# Altium PCB MolsonPCB.PcbDoc (part 1 of 9)
Units mil, origin at the board's own origin, x right, y up, seen from the top; angles counter-clockwise.
Board outline 8000 x 6000 mil, 14 copper layers (TopLayer (1 oz), InternalPlane1 (0.5 oz), InternalPlane2 (0.5 oz), MidLayer1 (0.5 oz), InternalPlane3 (0.5 oz), MidLayer2 (0.5 oz), InternalPlane4 (0.5 oz), InternalPlane5 (0.5 oz), MidLayer3 (0.5 oz), InternalPlane6 (0.5 oz), MidLayer4 (0.5 oz), InternalPlane7 (0.5 oz), InternalPlane8 (0.5 oz), BottomLayer (1 oz)), stack 86.2 mil thick; 657 components, 643 nets, 3094 pads, 1958 vias.
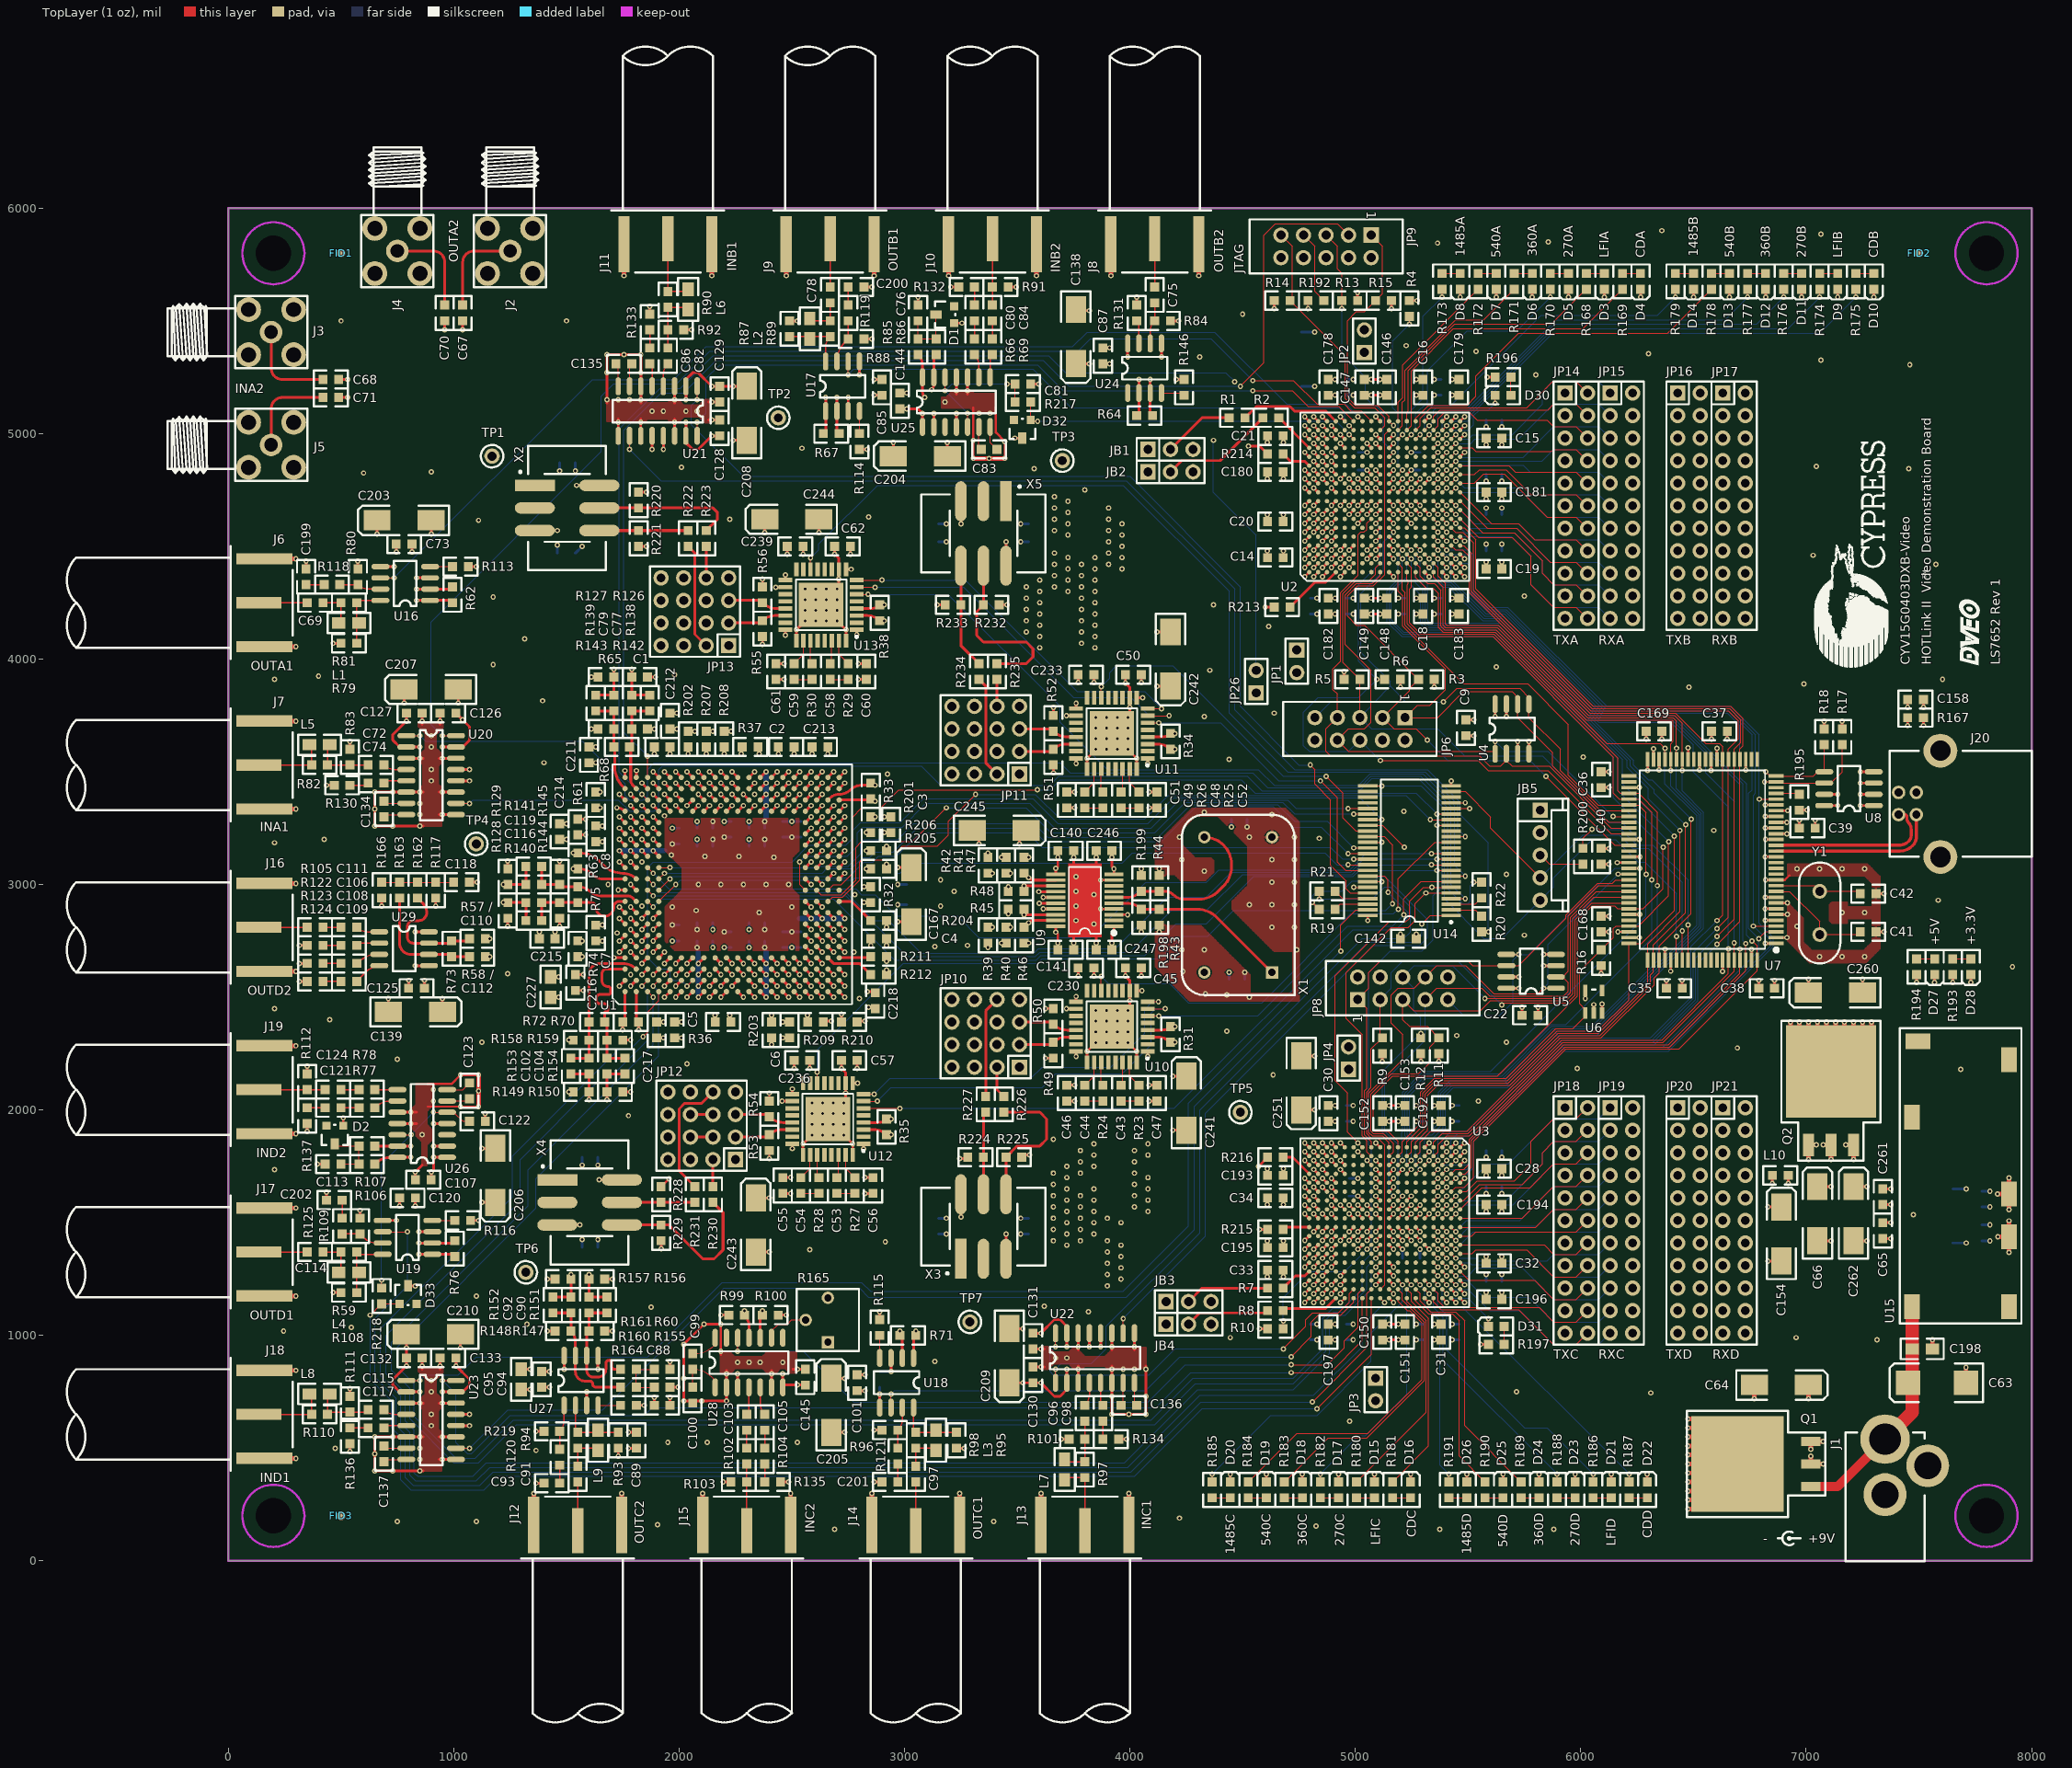
[diagram p0: TopLayer (1 oz) view]
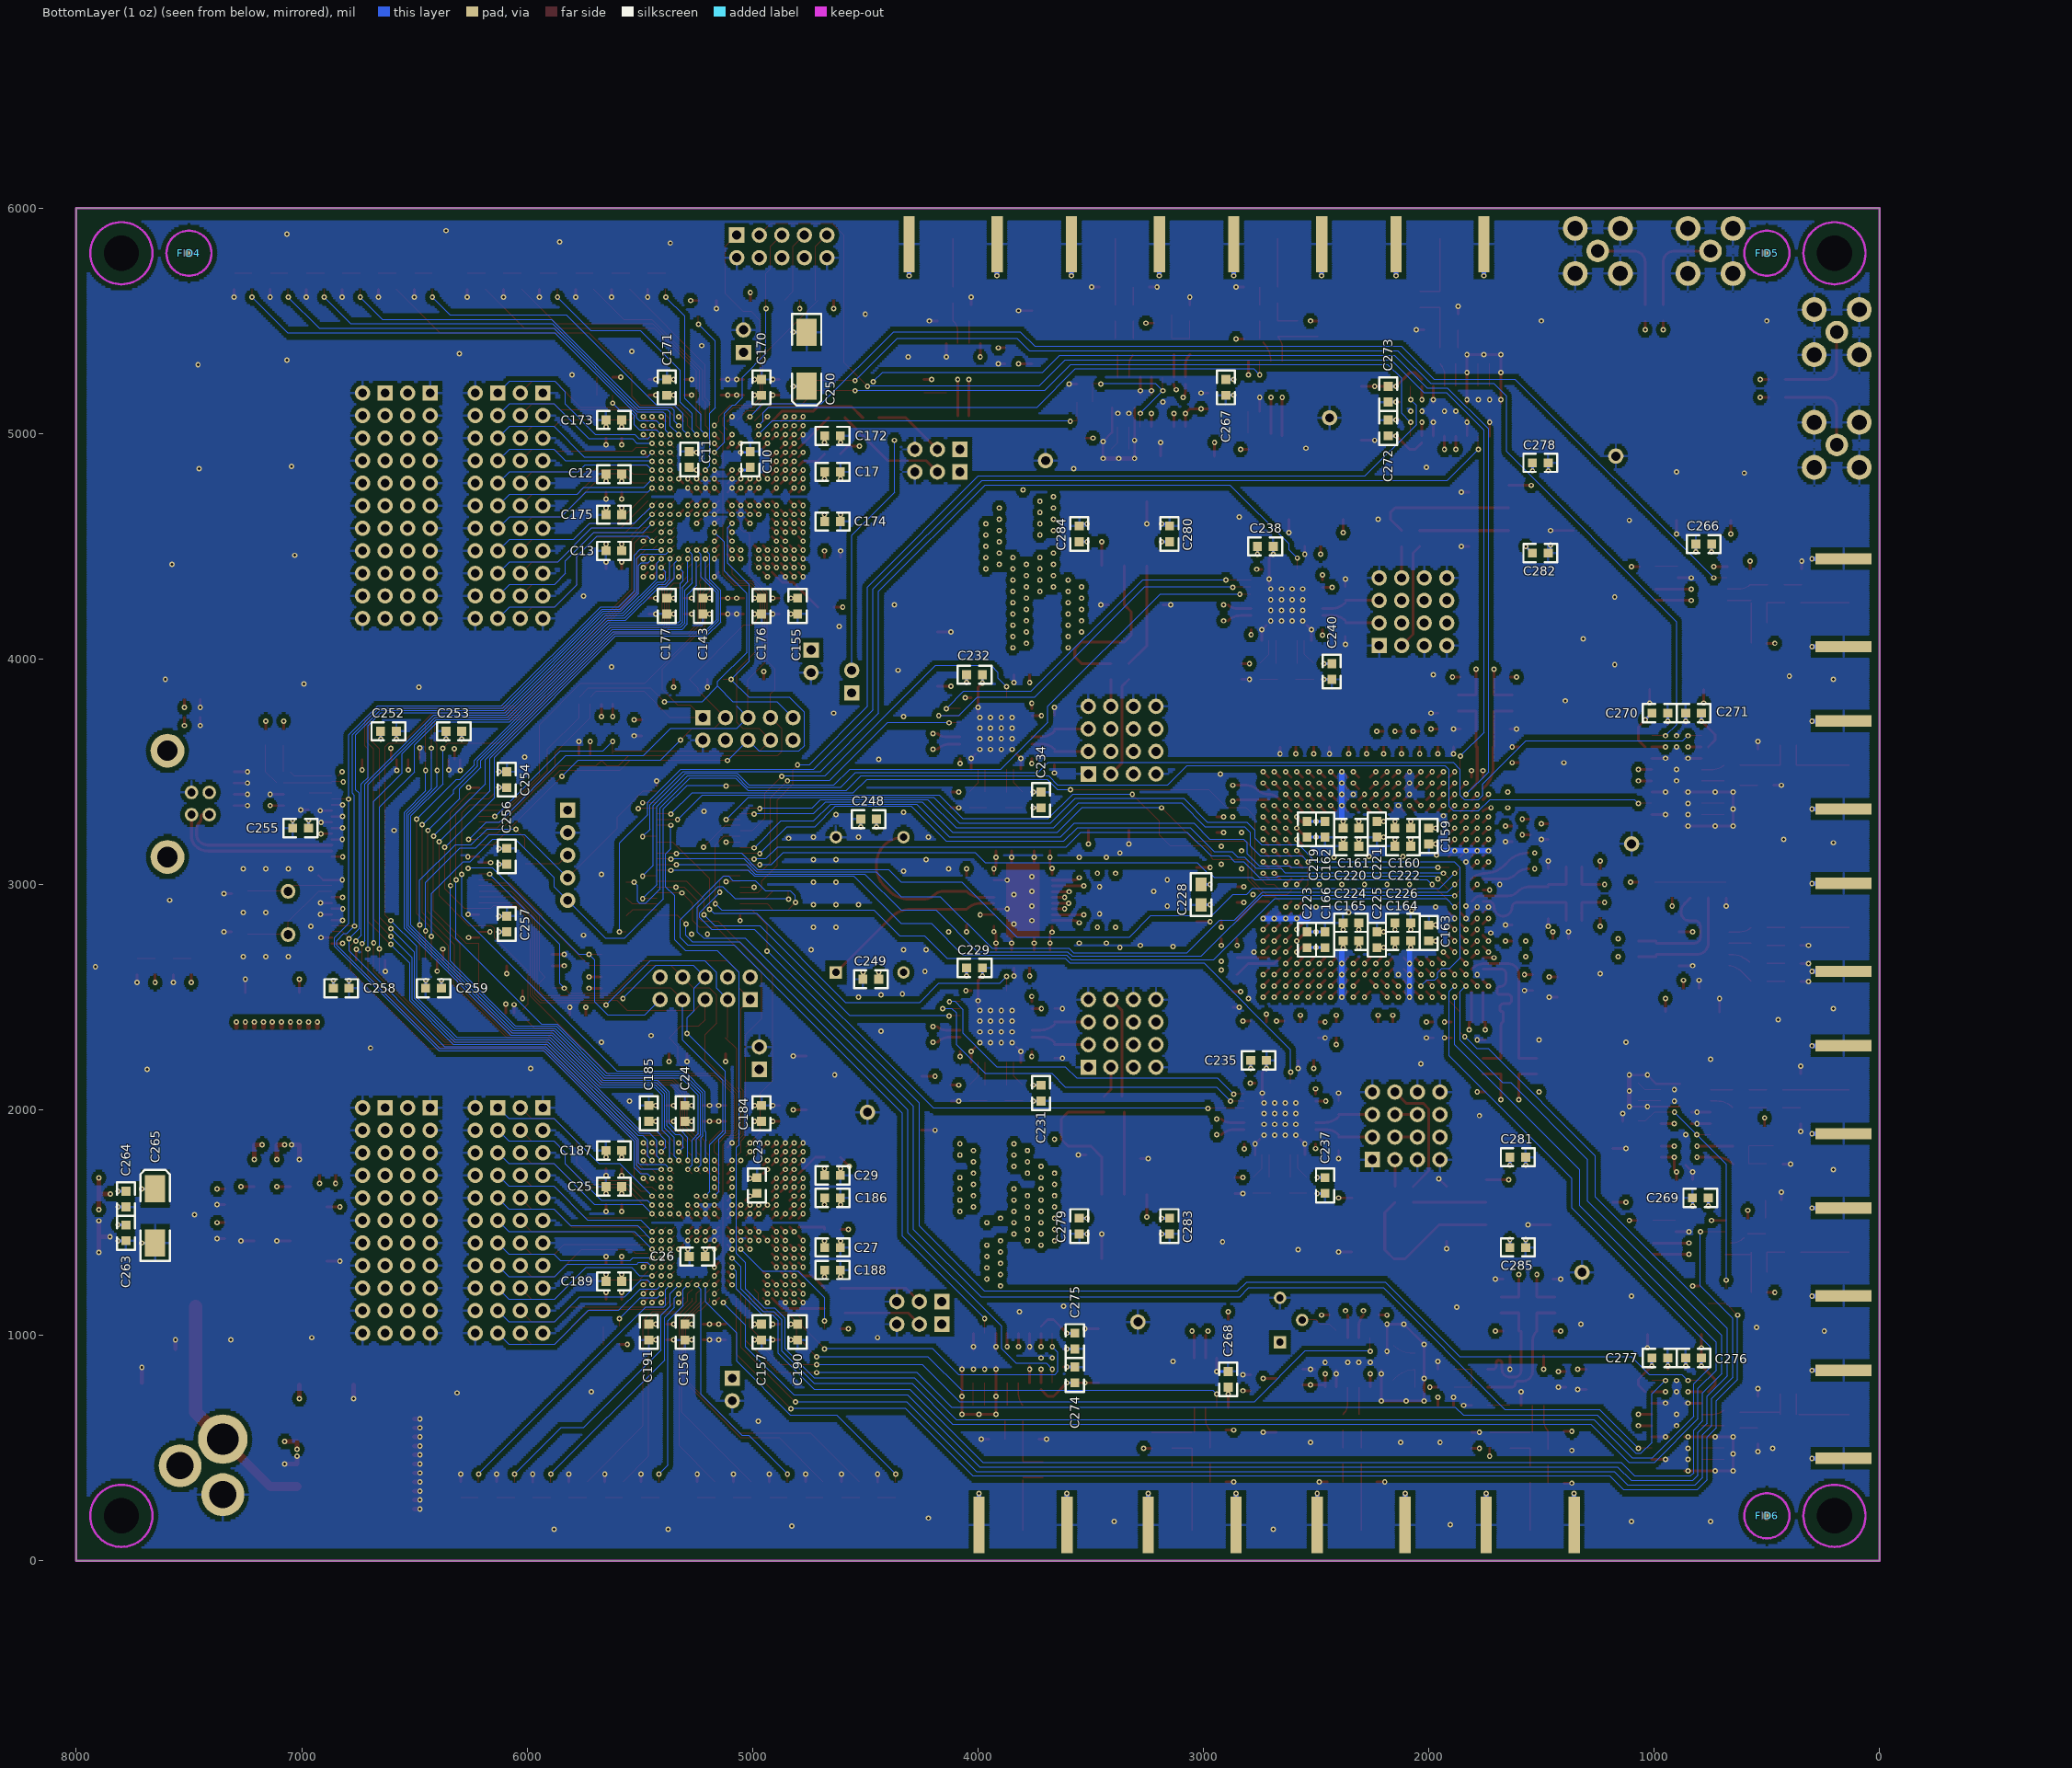
[diagram p1: BottomLayer (1 oz) view, seen from below]
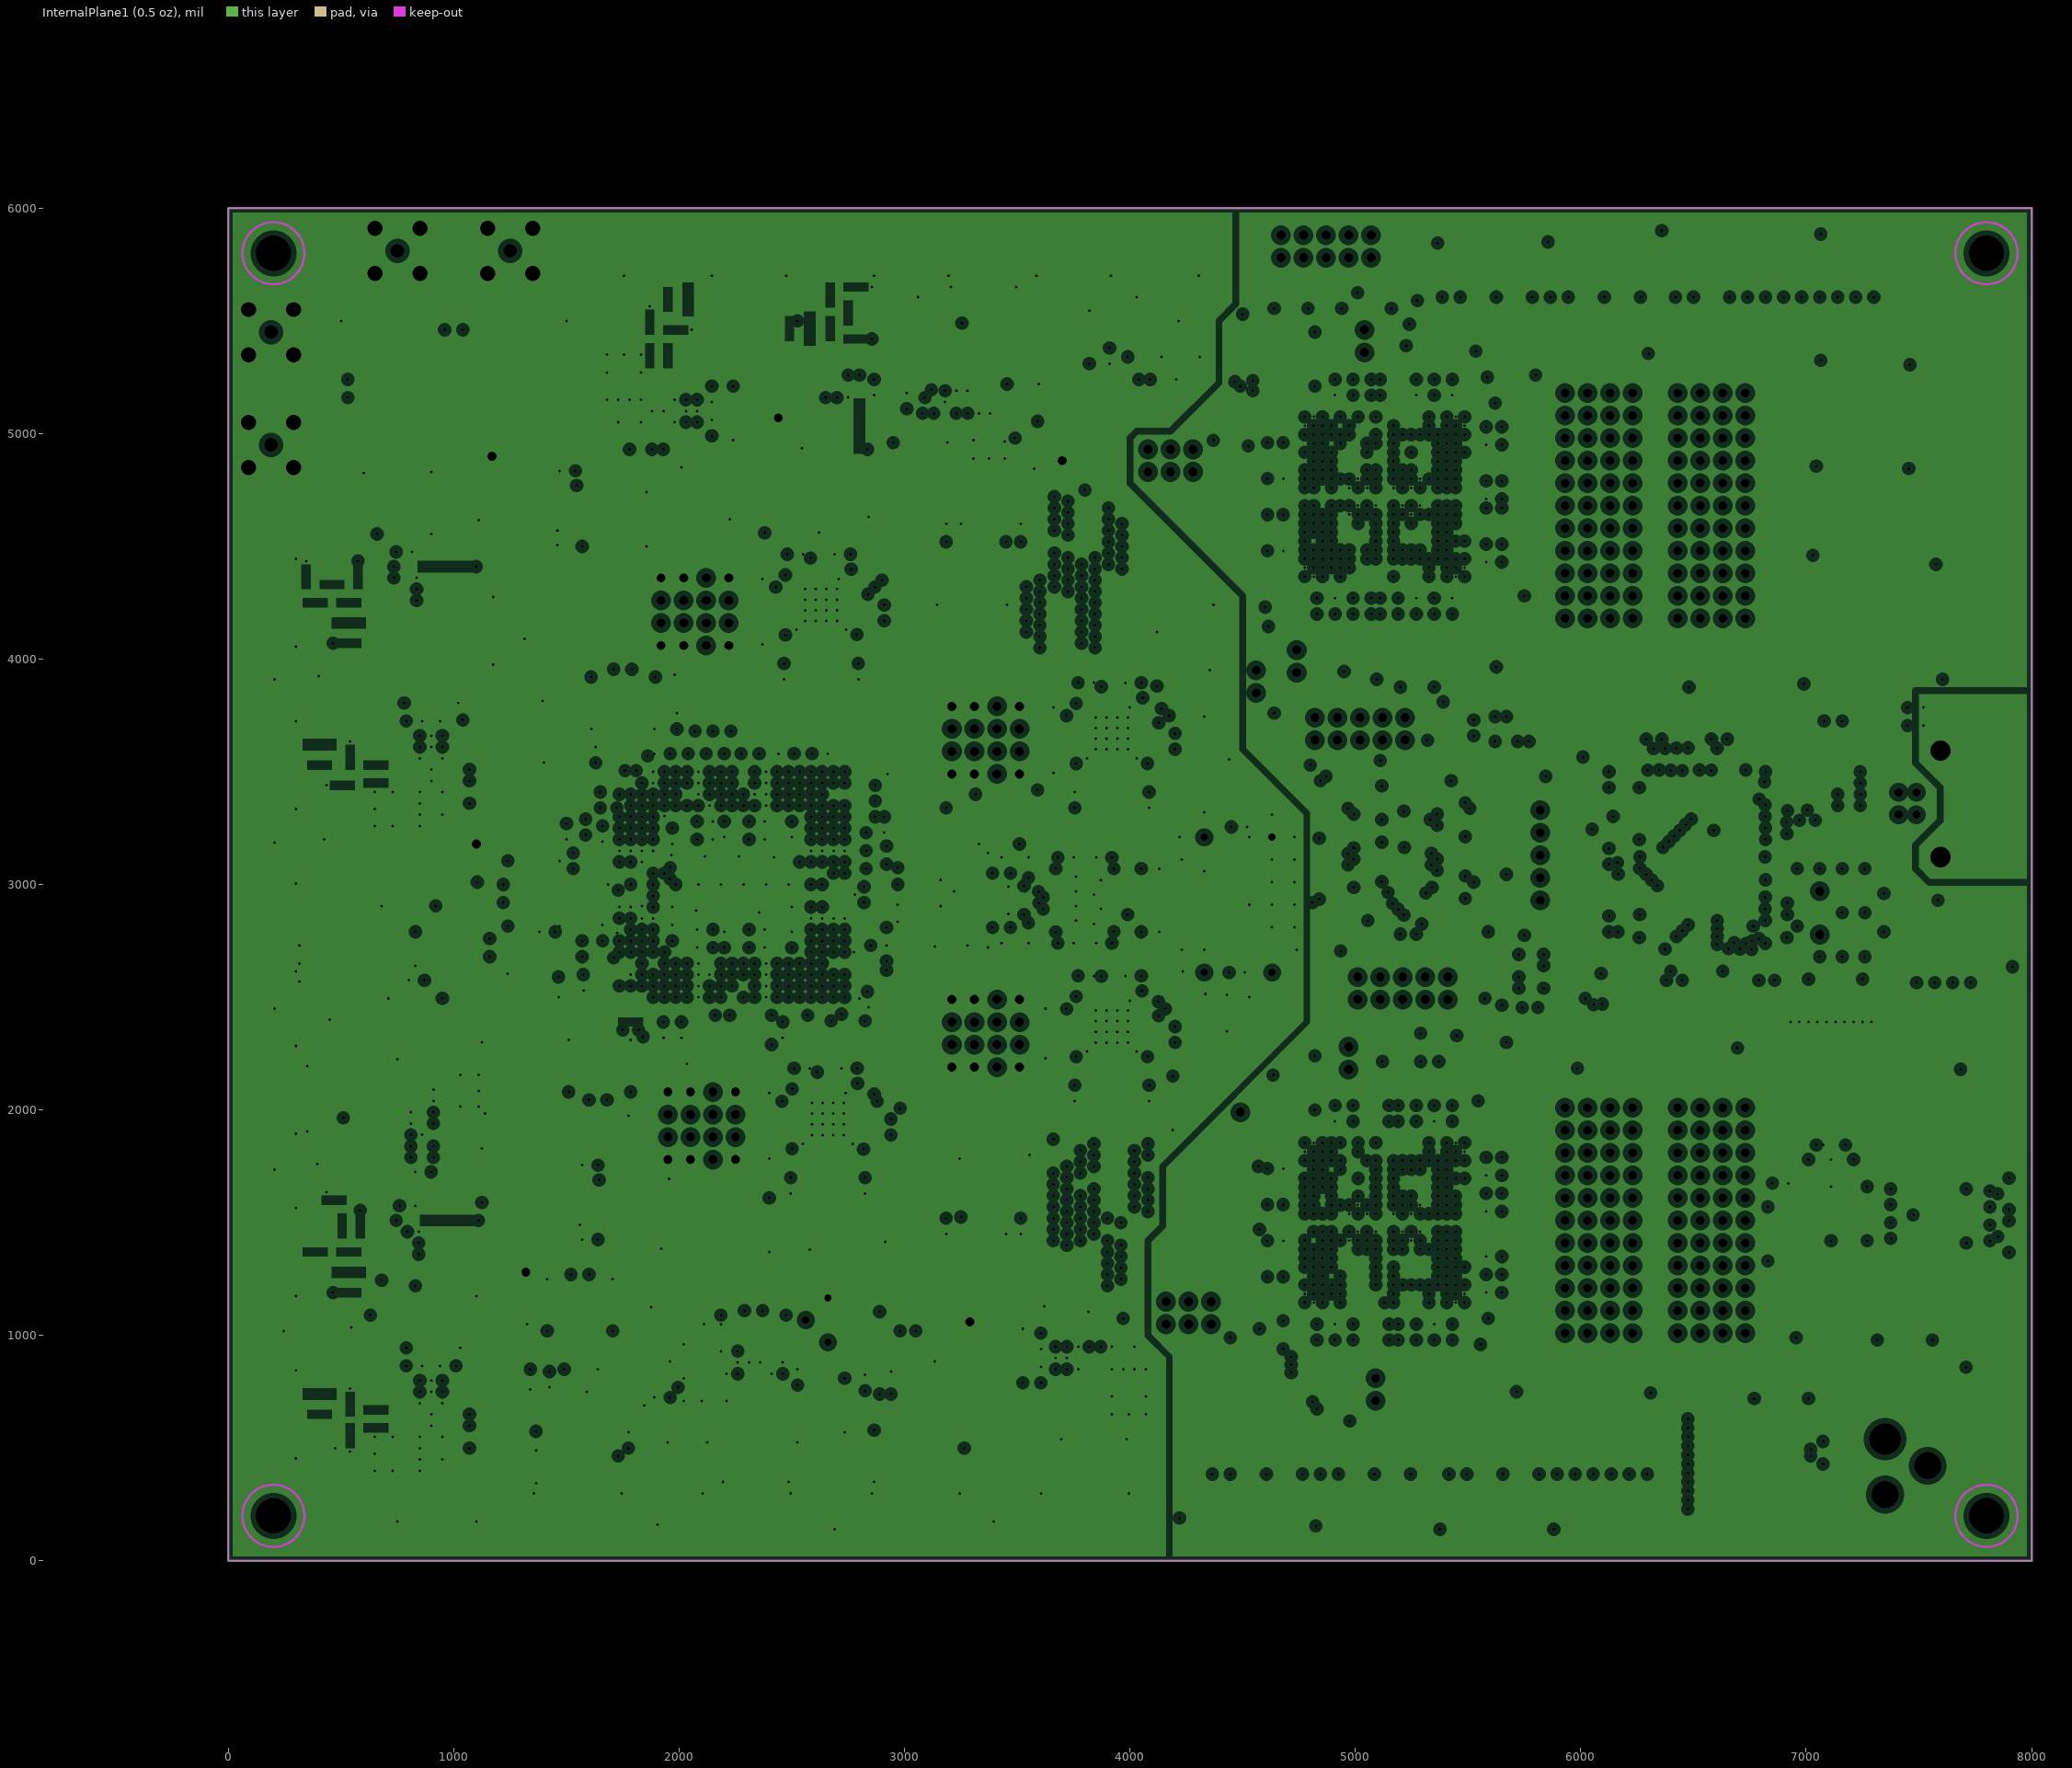
[diagram p2: InternalPlane1 (0.5 oz), clearances drawn from the general rule]
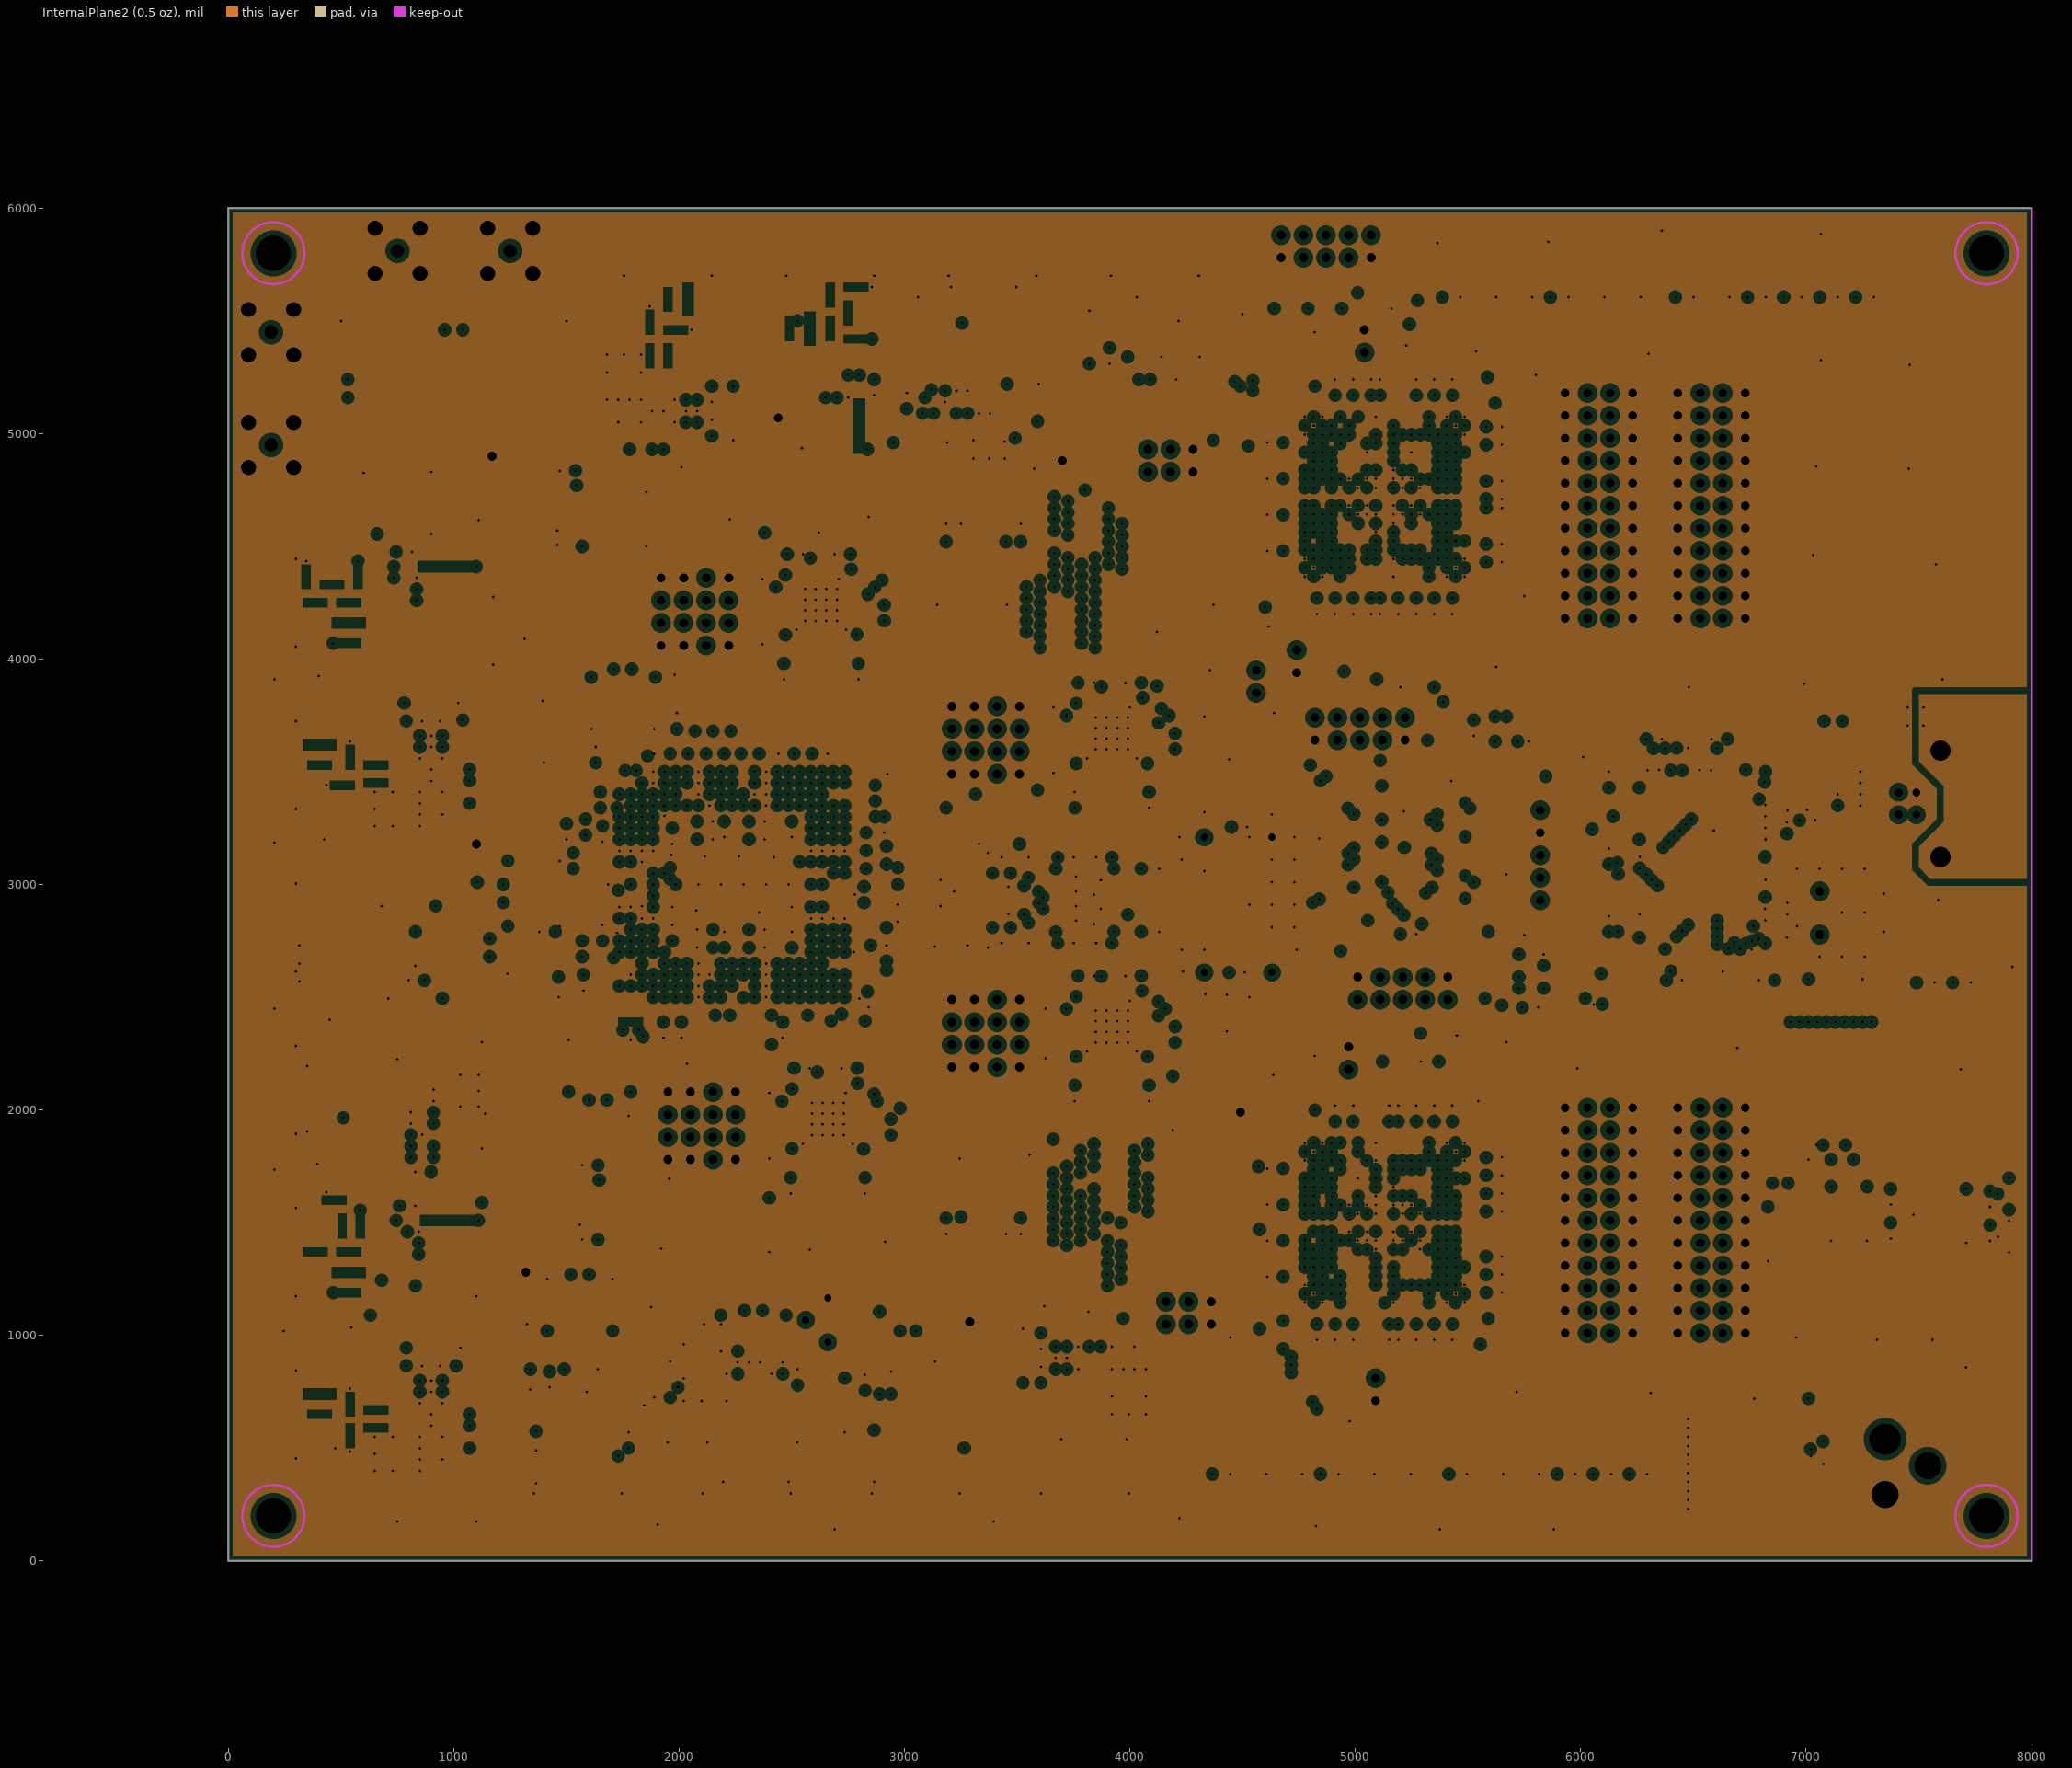
[diagram p3: InternalPlane2 (0.5 oz), clearances drawn from the general rule]
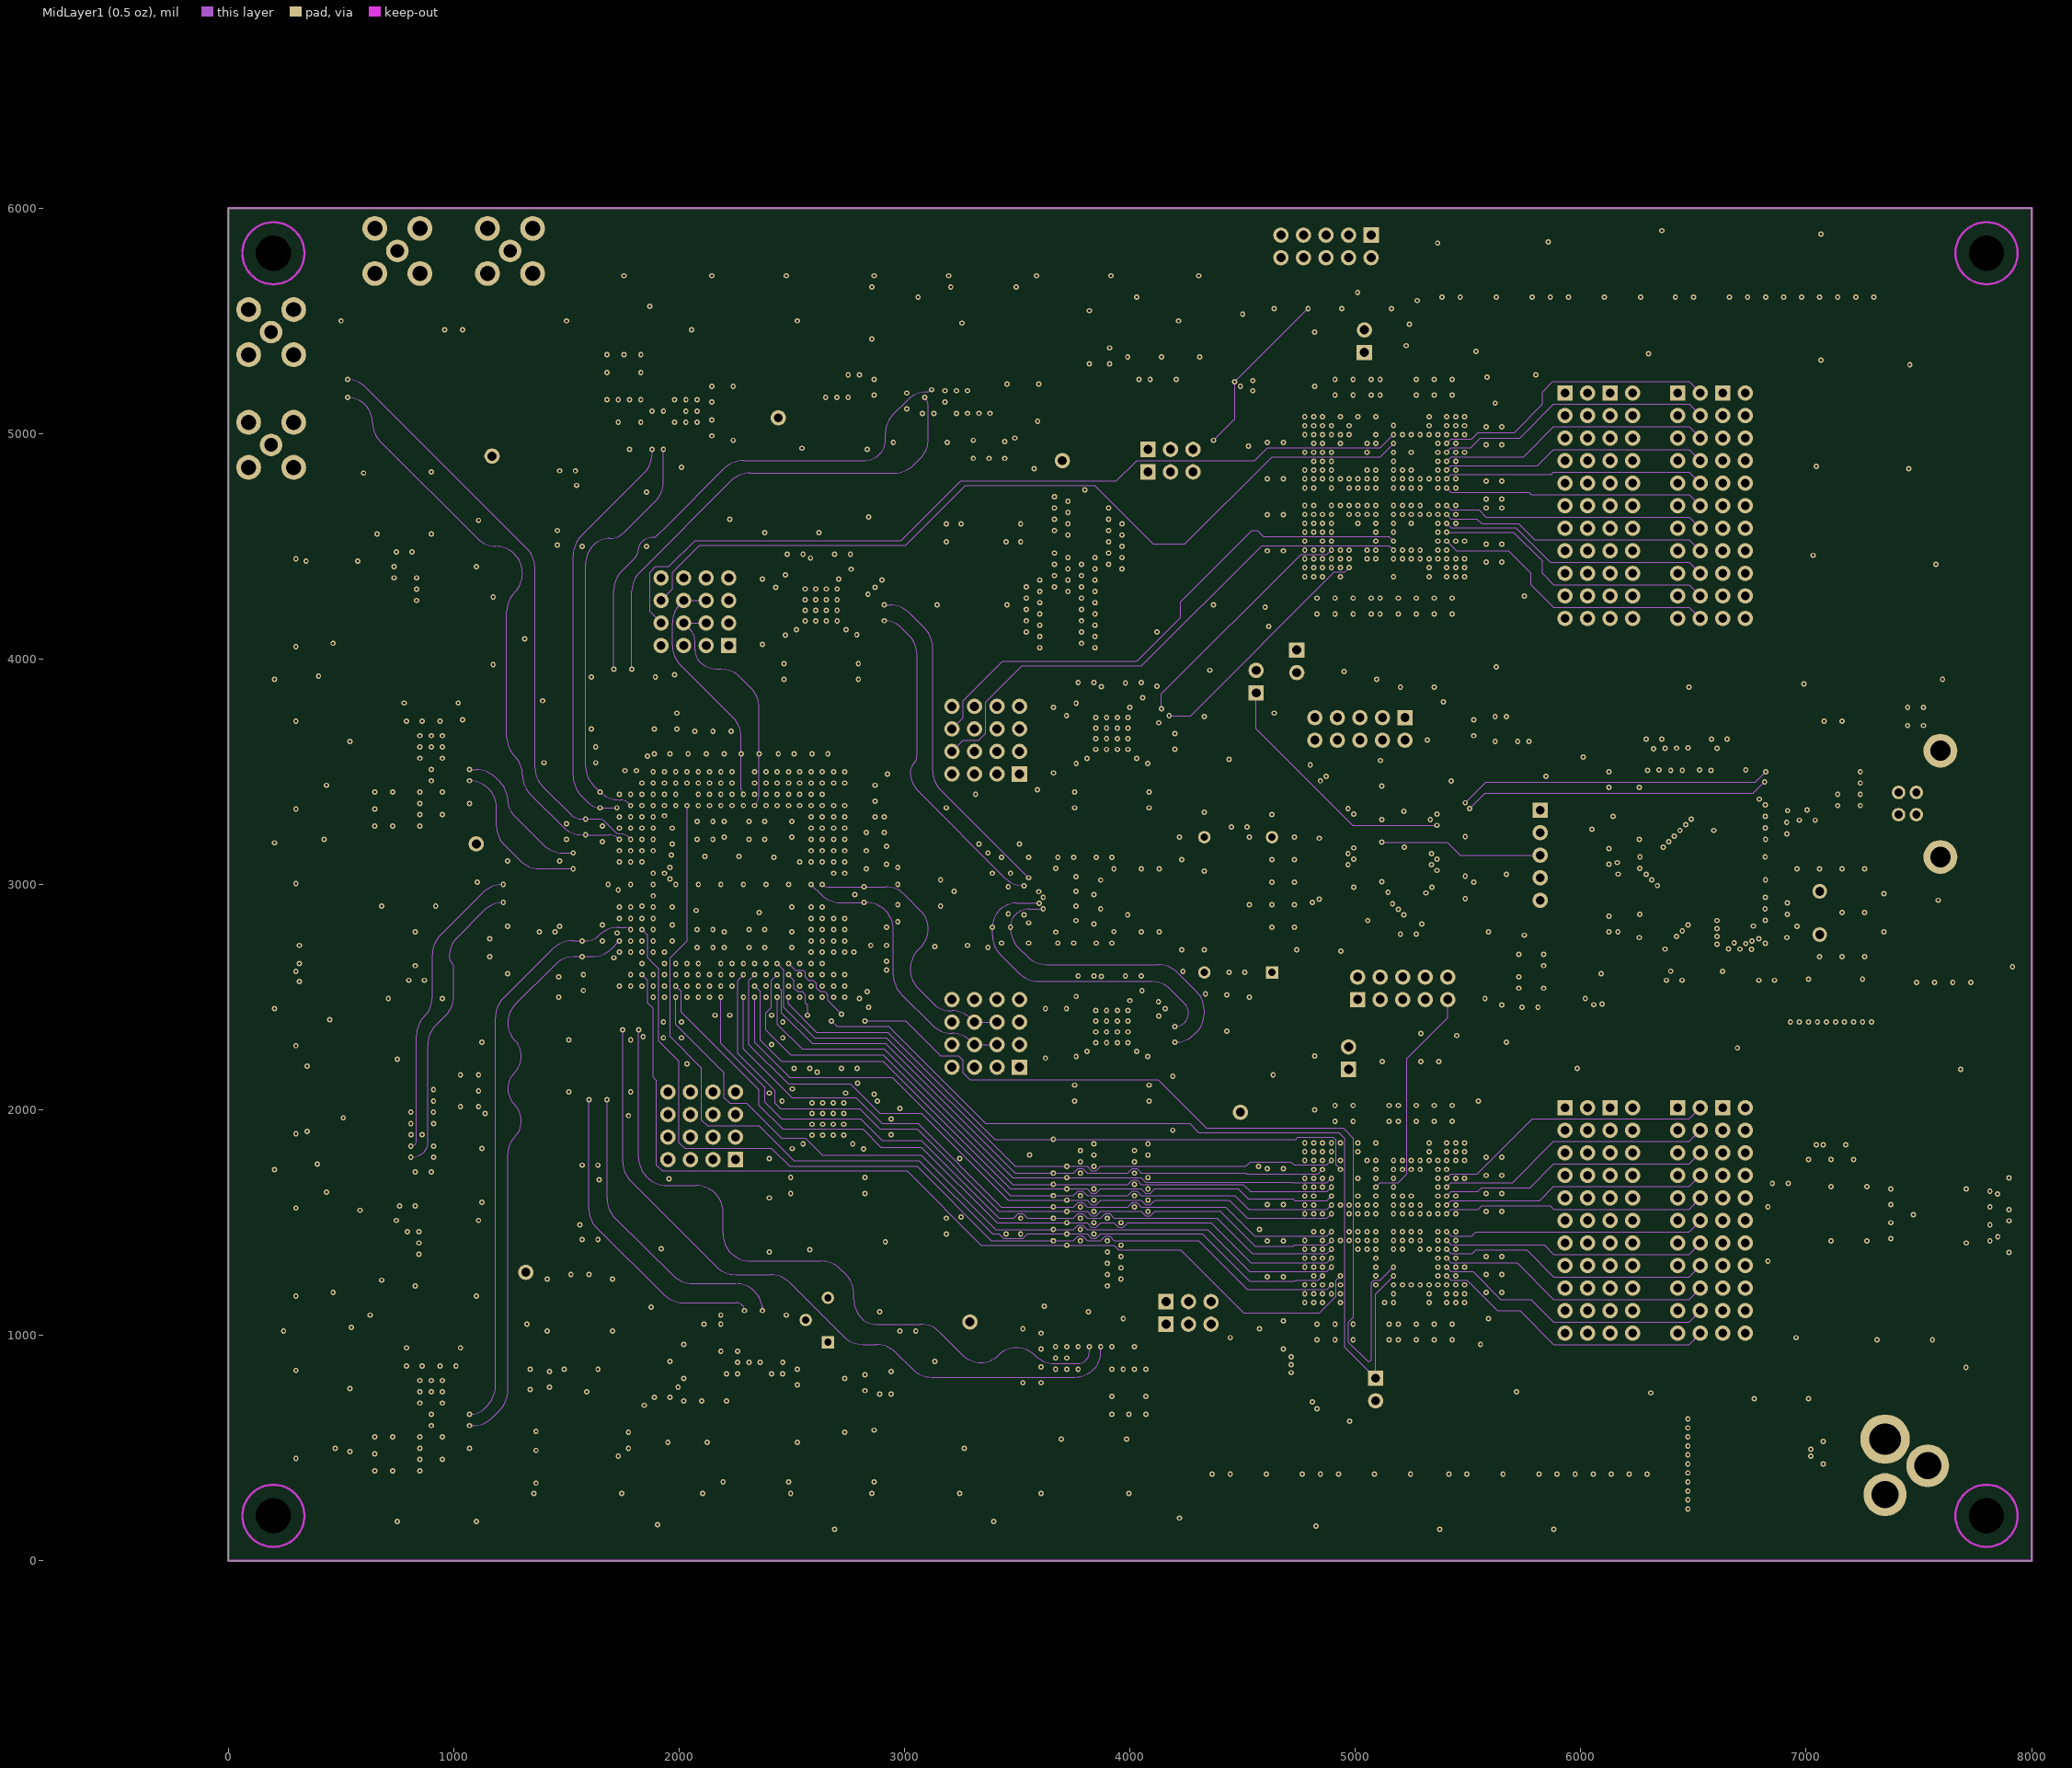
[diagram p4: MidLayer1 (0.5 oz)]
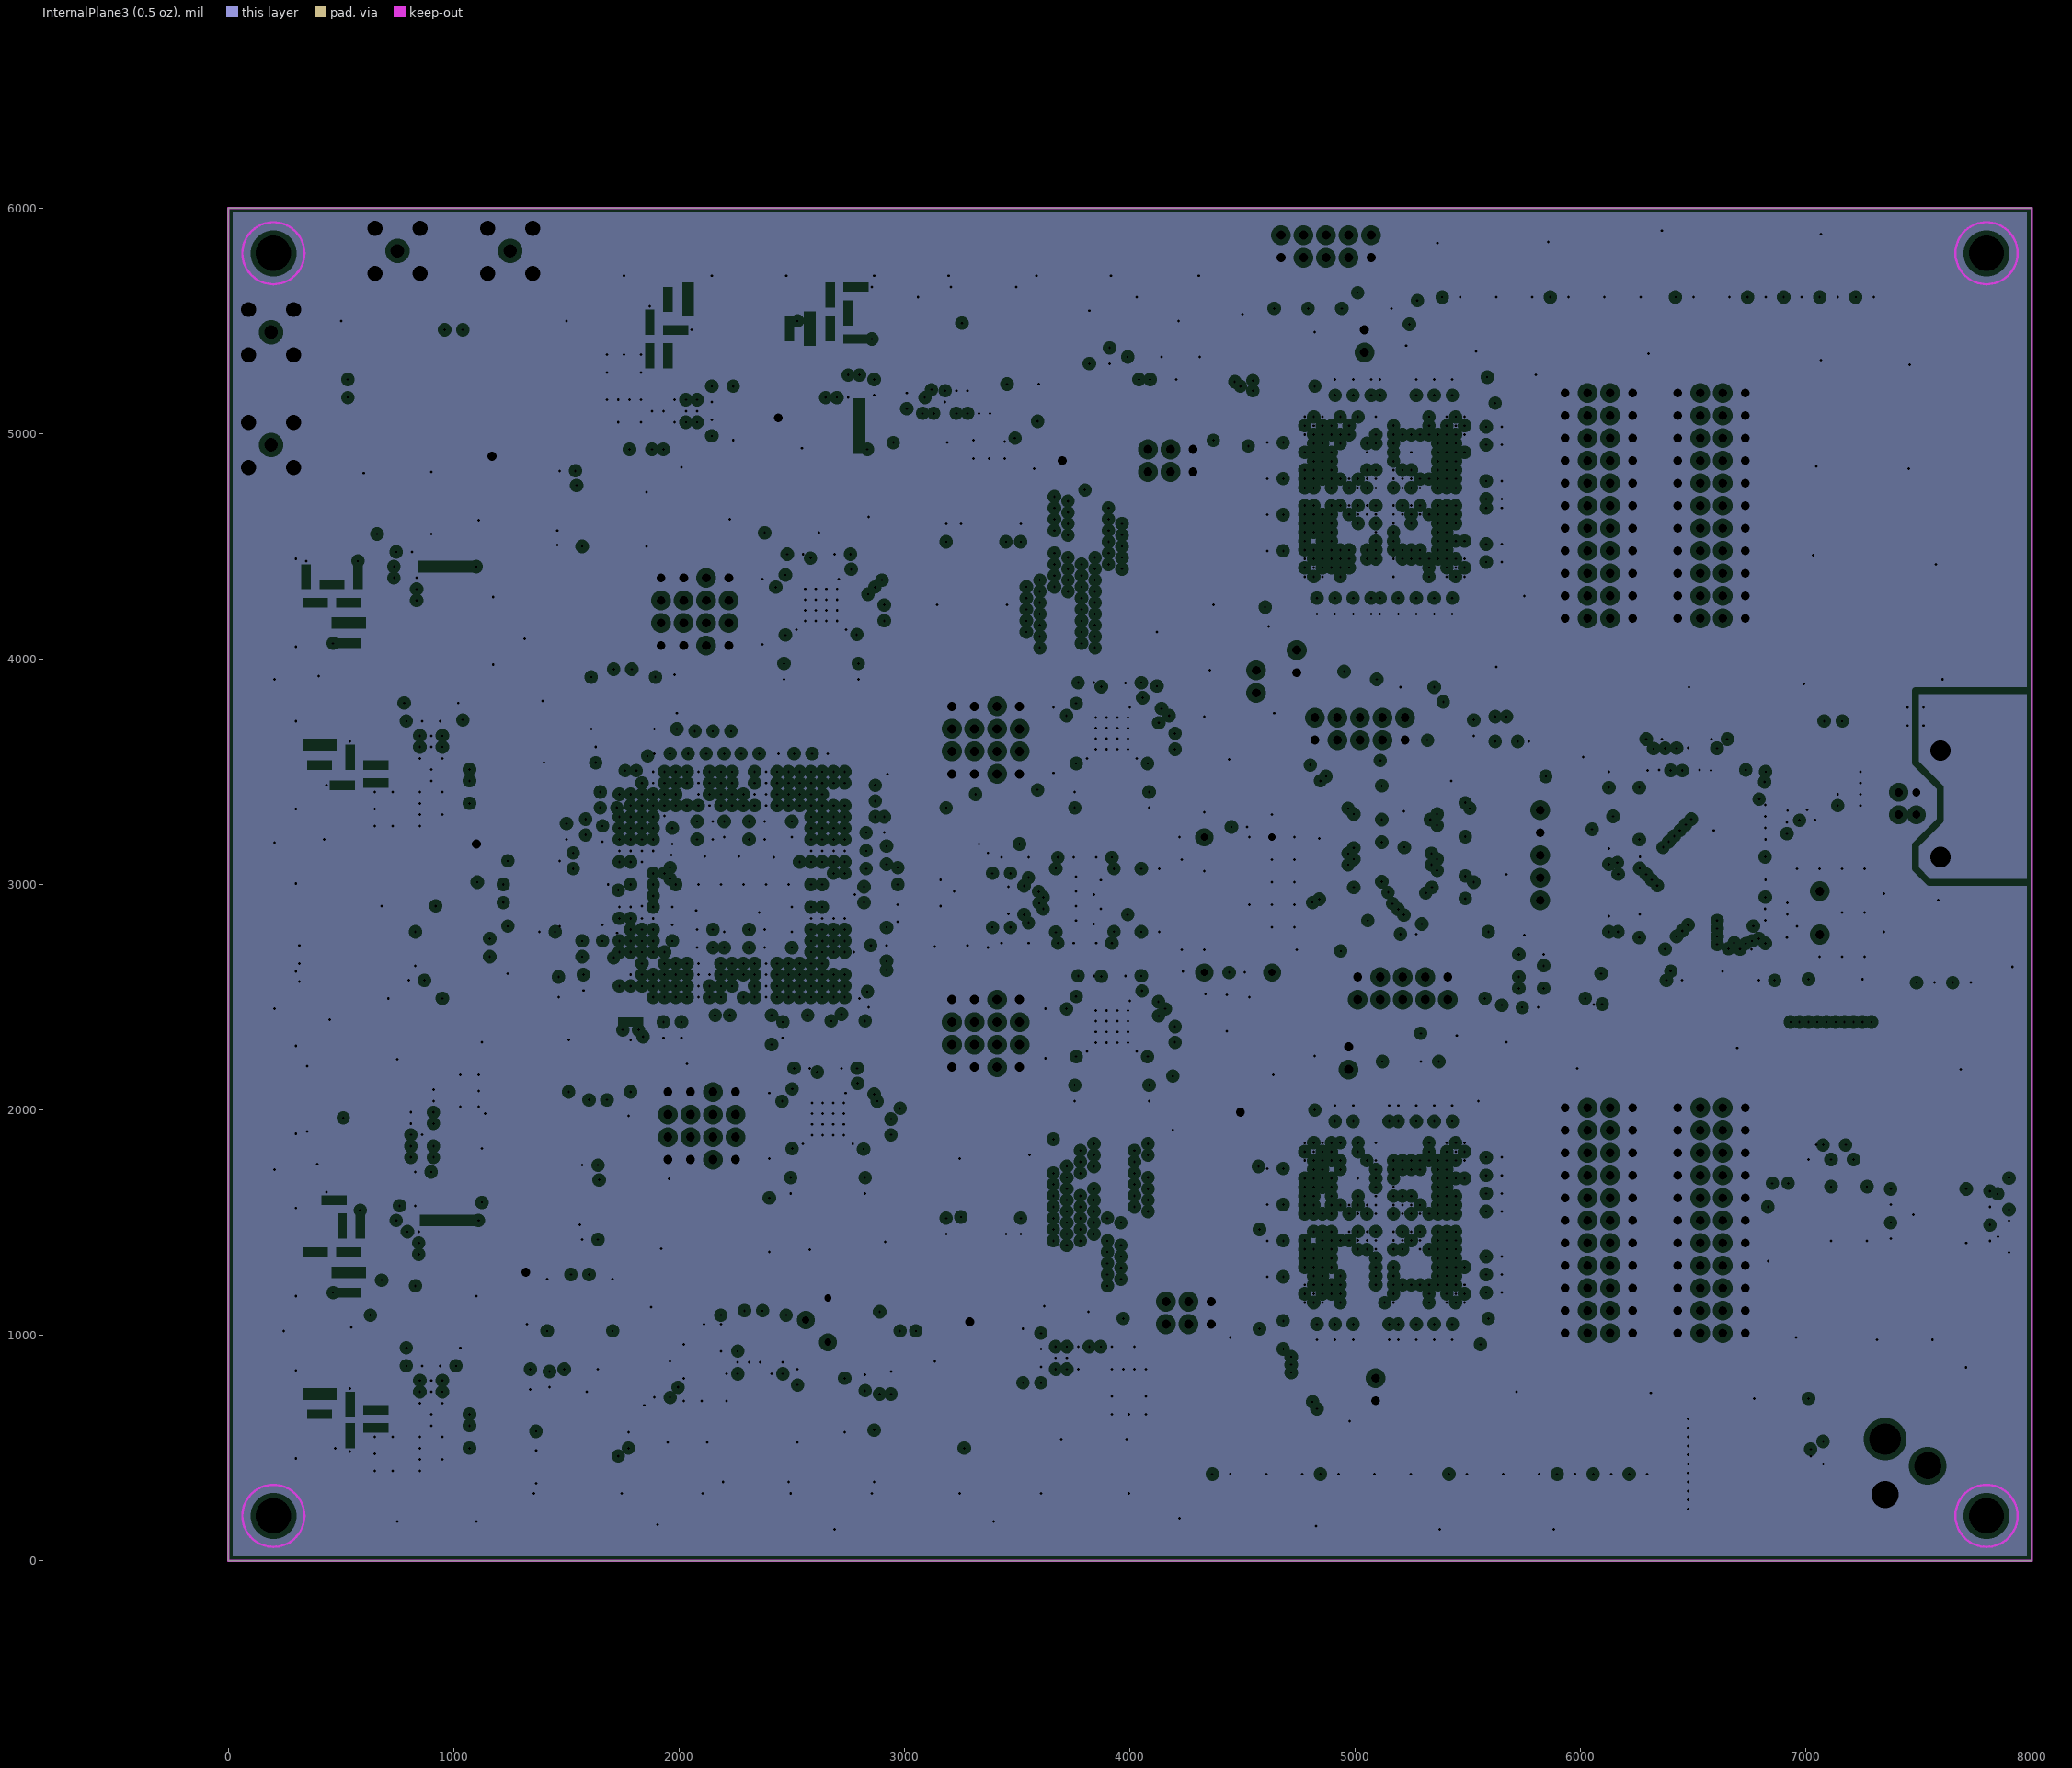
[diagram p5: InternalPlane3 (0.5 oz), clearances drawn from the general rule]
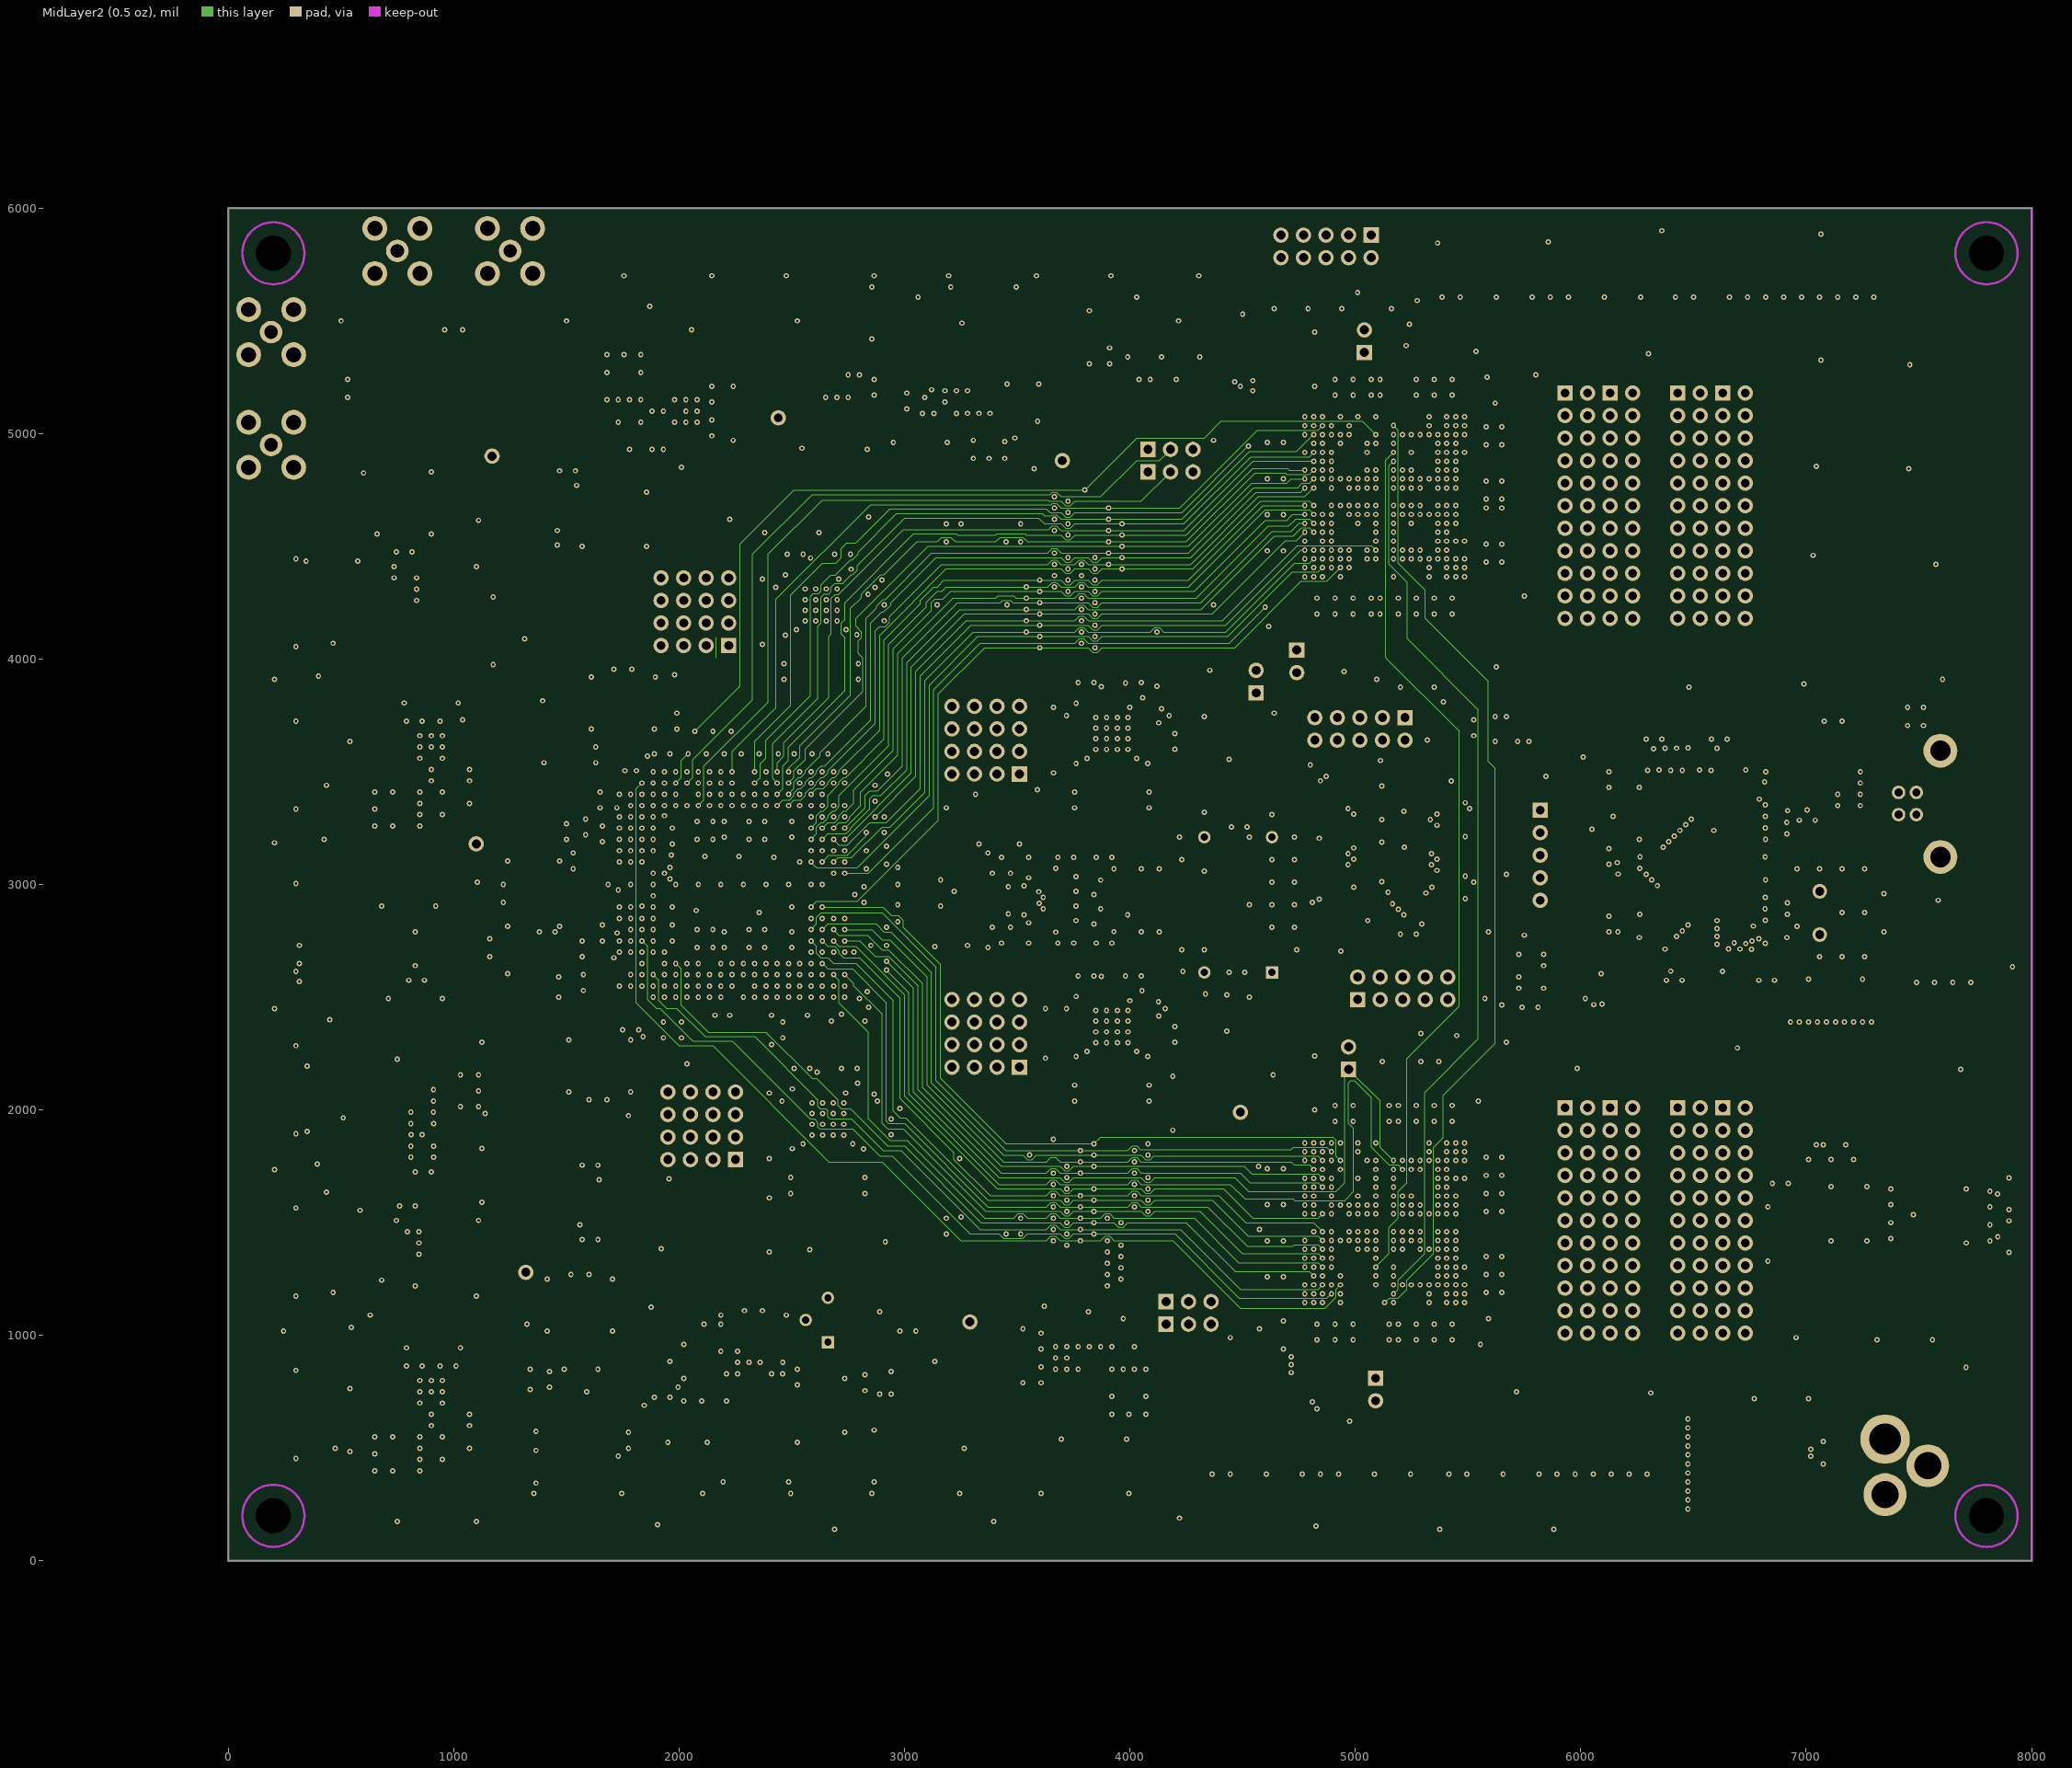
[diagram p6: MidLayer2 (0.5 oz)]
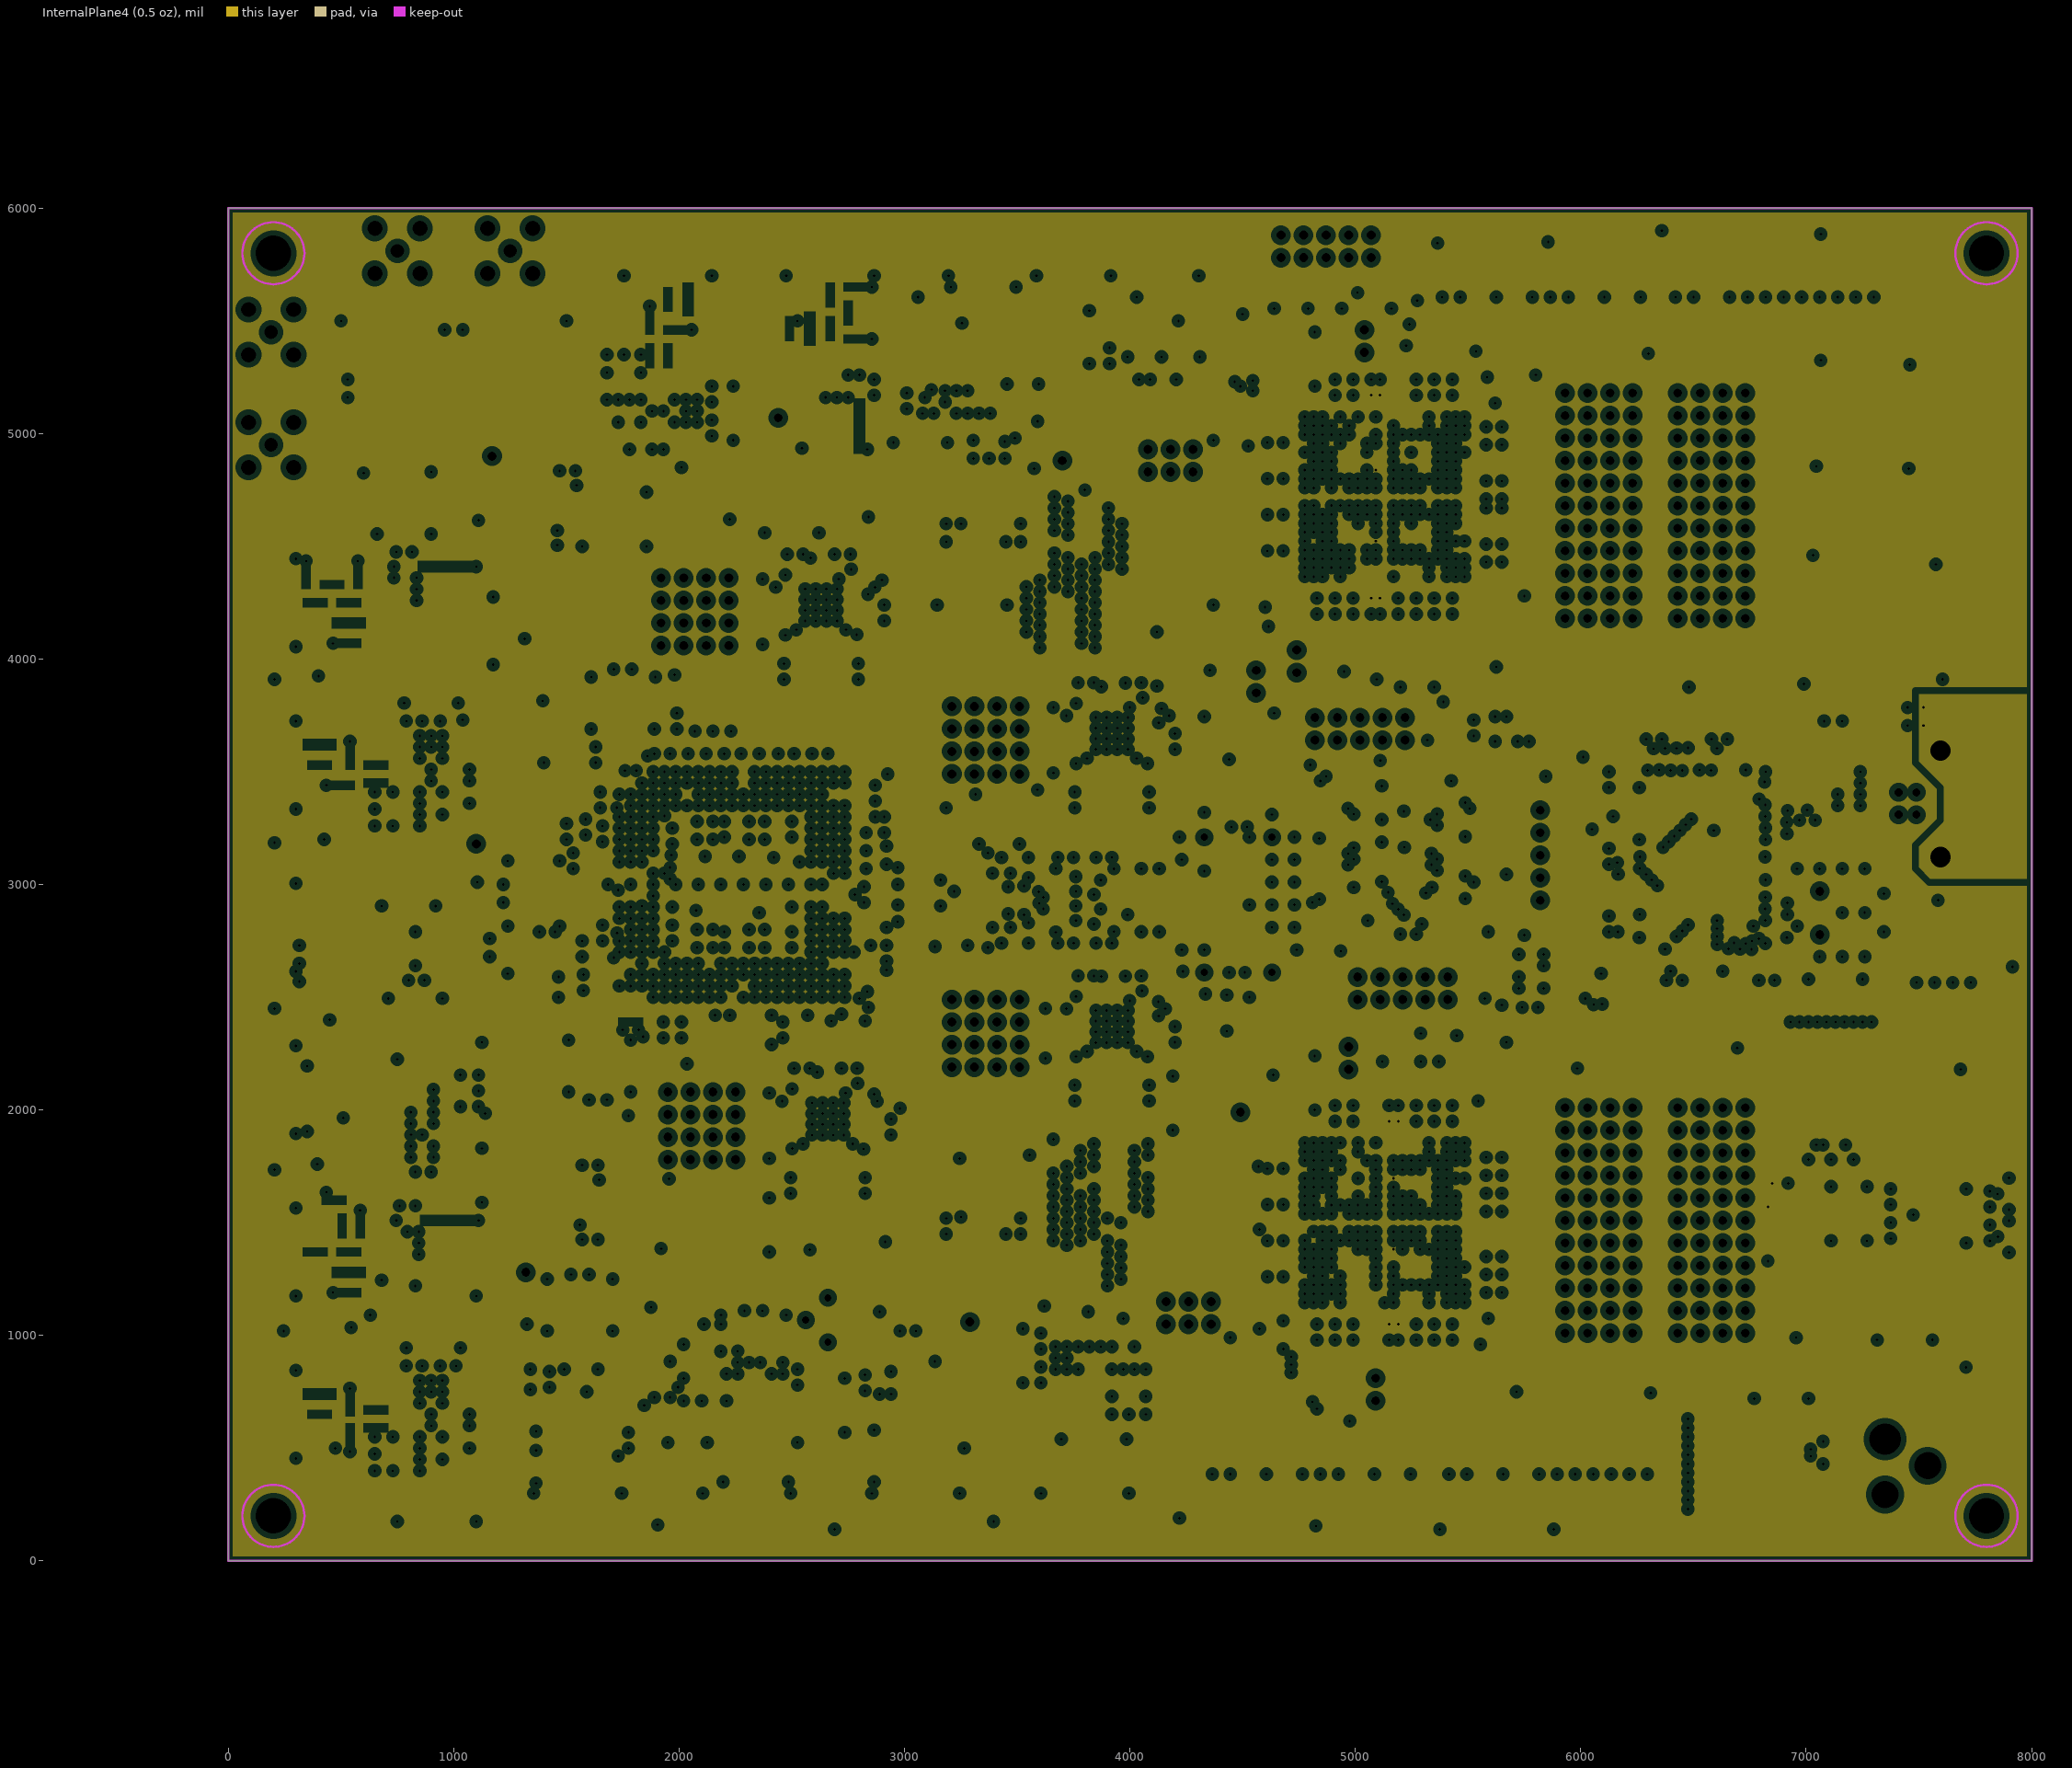
[diagram p7: InternalPlane4 (0.5 oz), clearances drawn from the general rule]
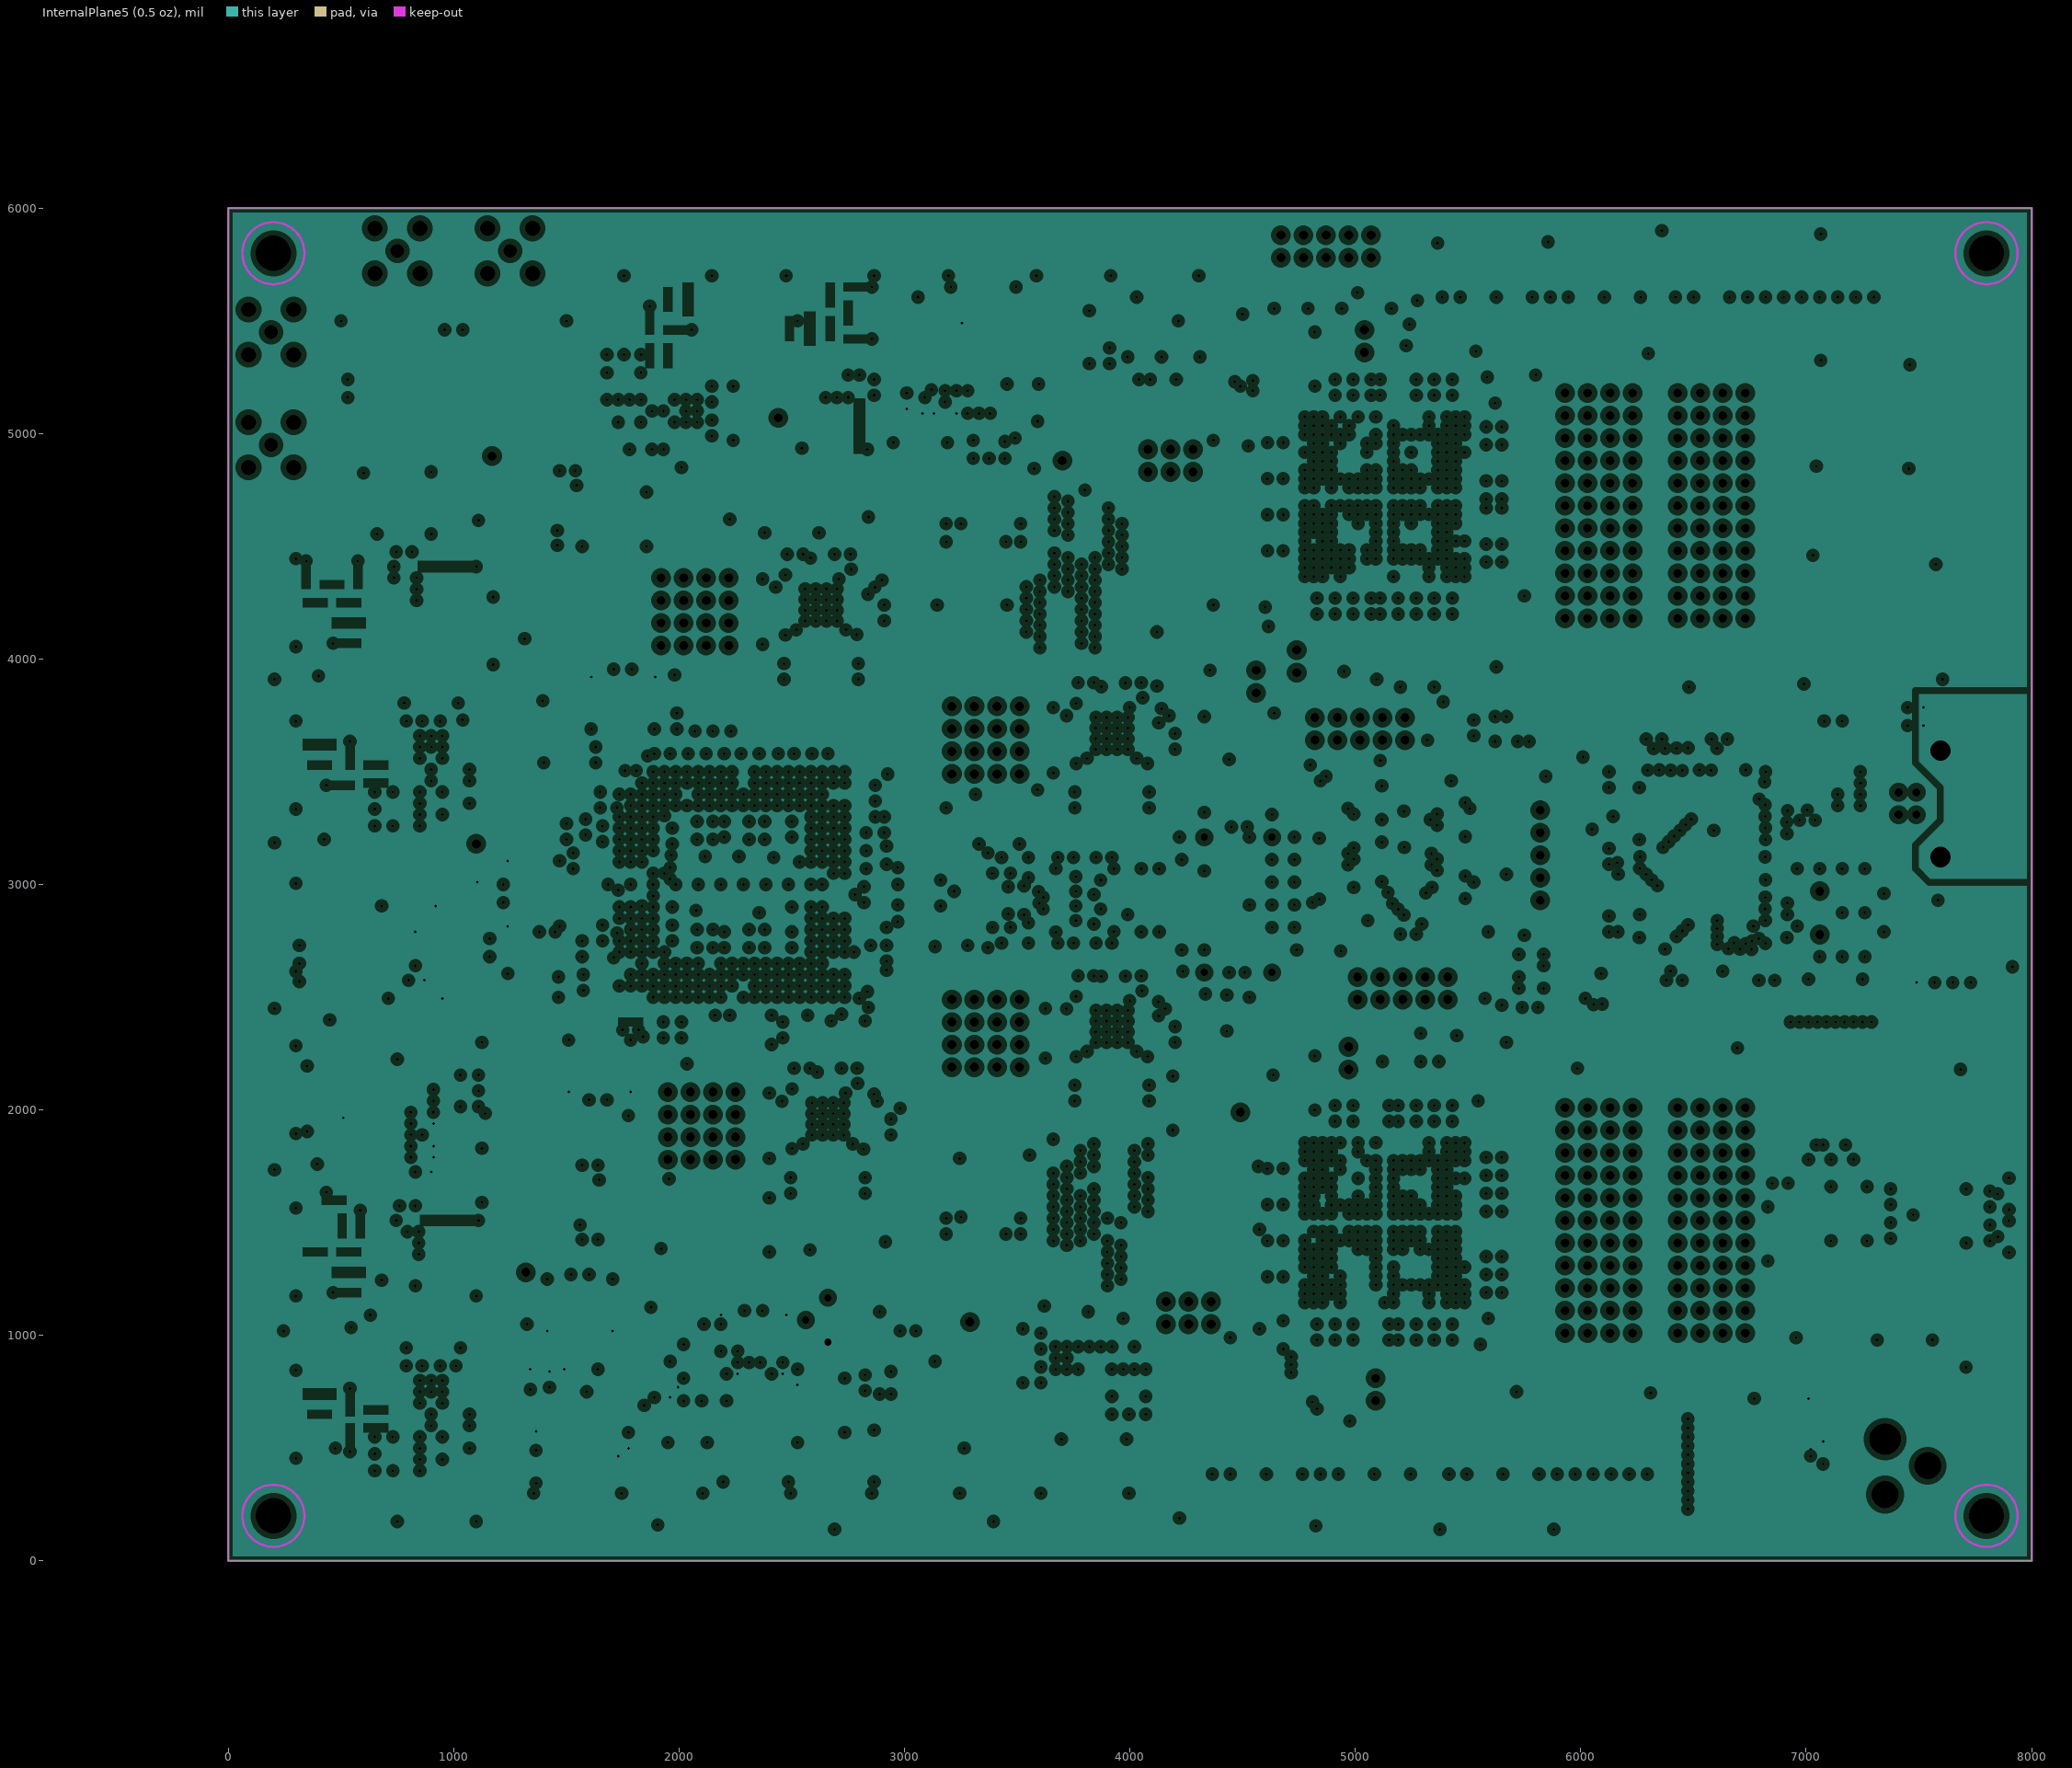
[diagram p8: InternalPlane5 (0.5 oz), clearances drawn from the general rule]
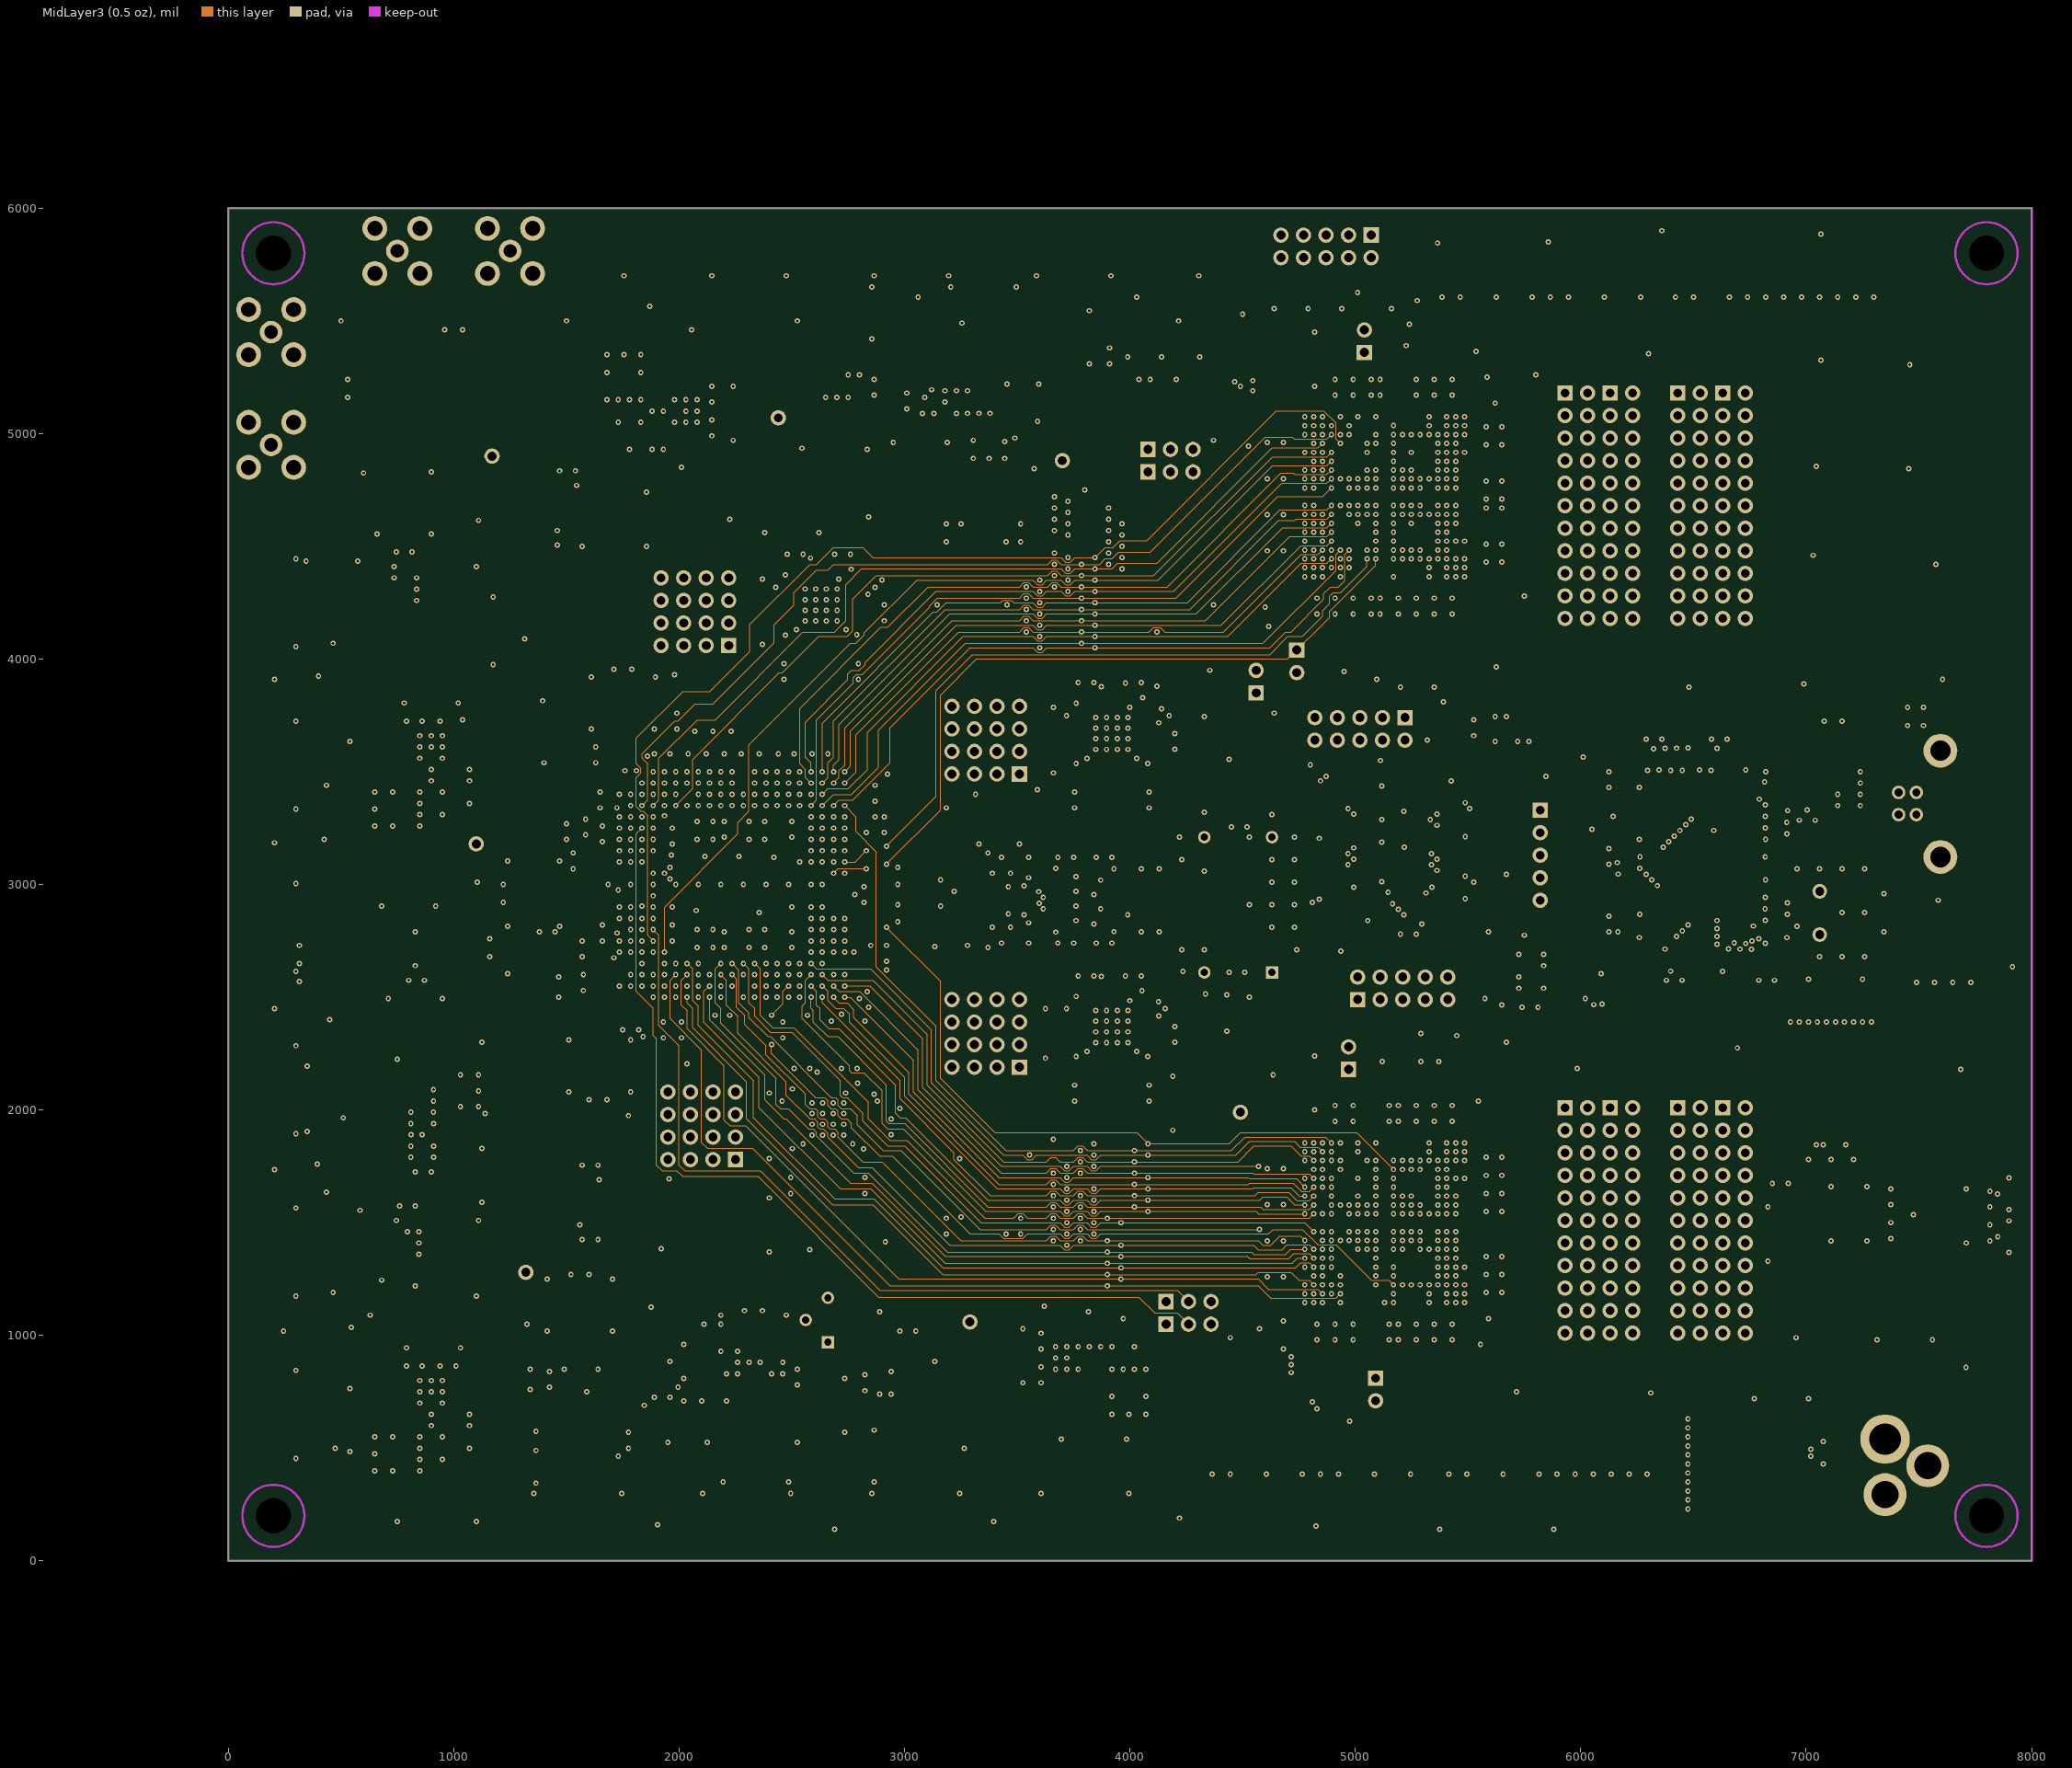
[diagram p9: MidLayer3 (0.5 oz)]
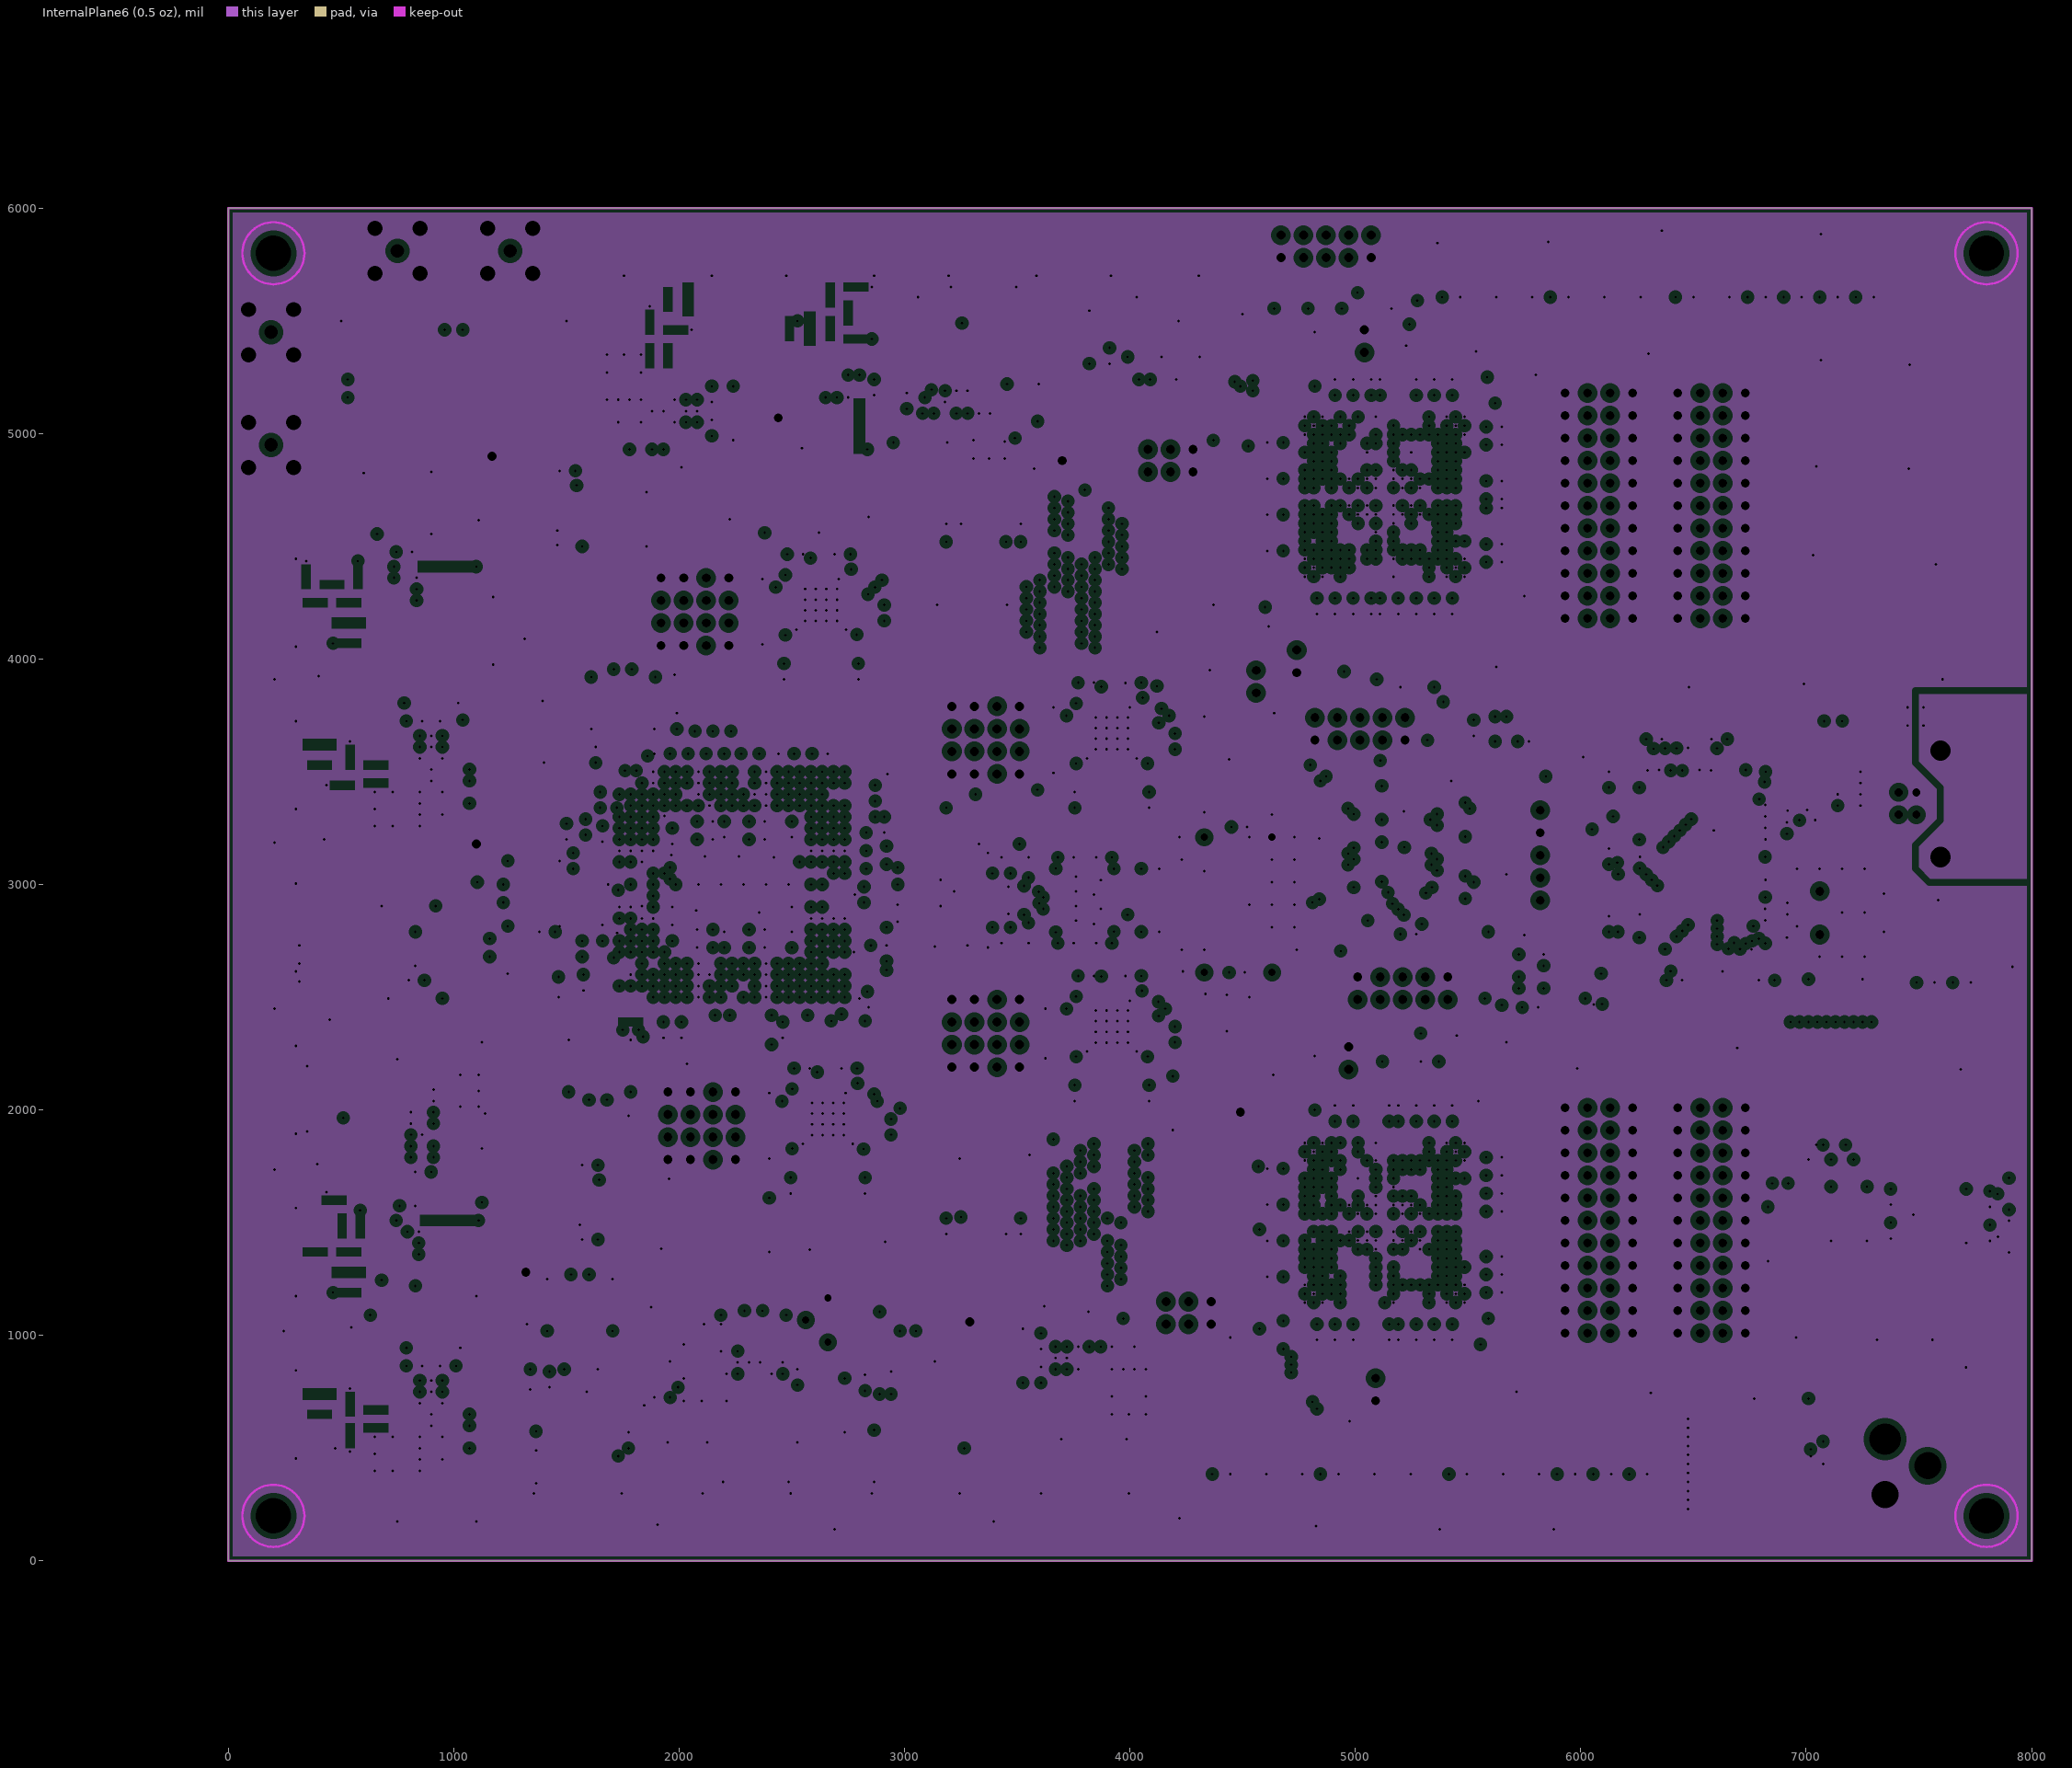
[diagram p10: InternalPlane6 (0.5 oz), clearances drawn from the general rule]
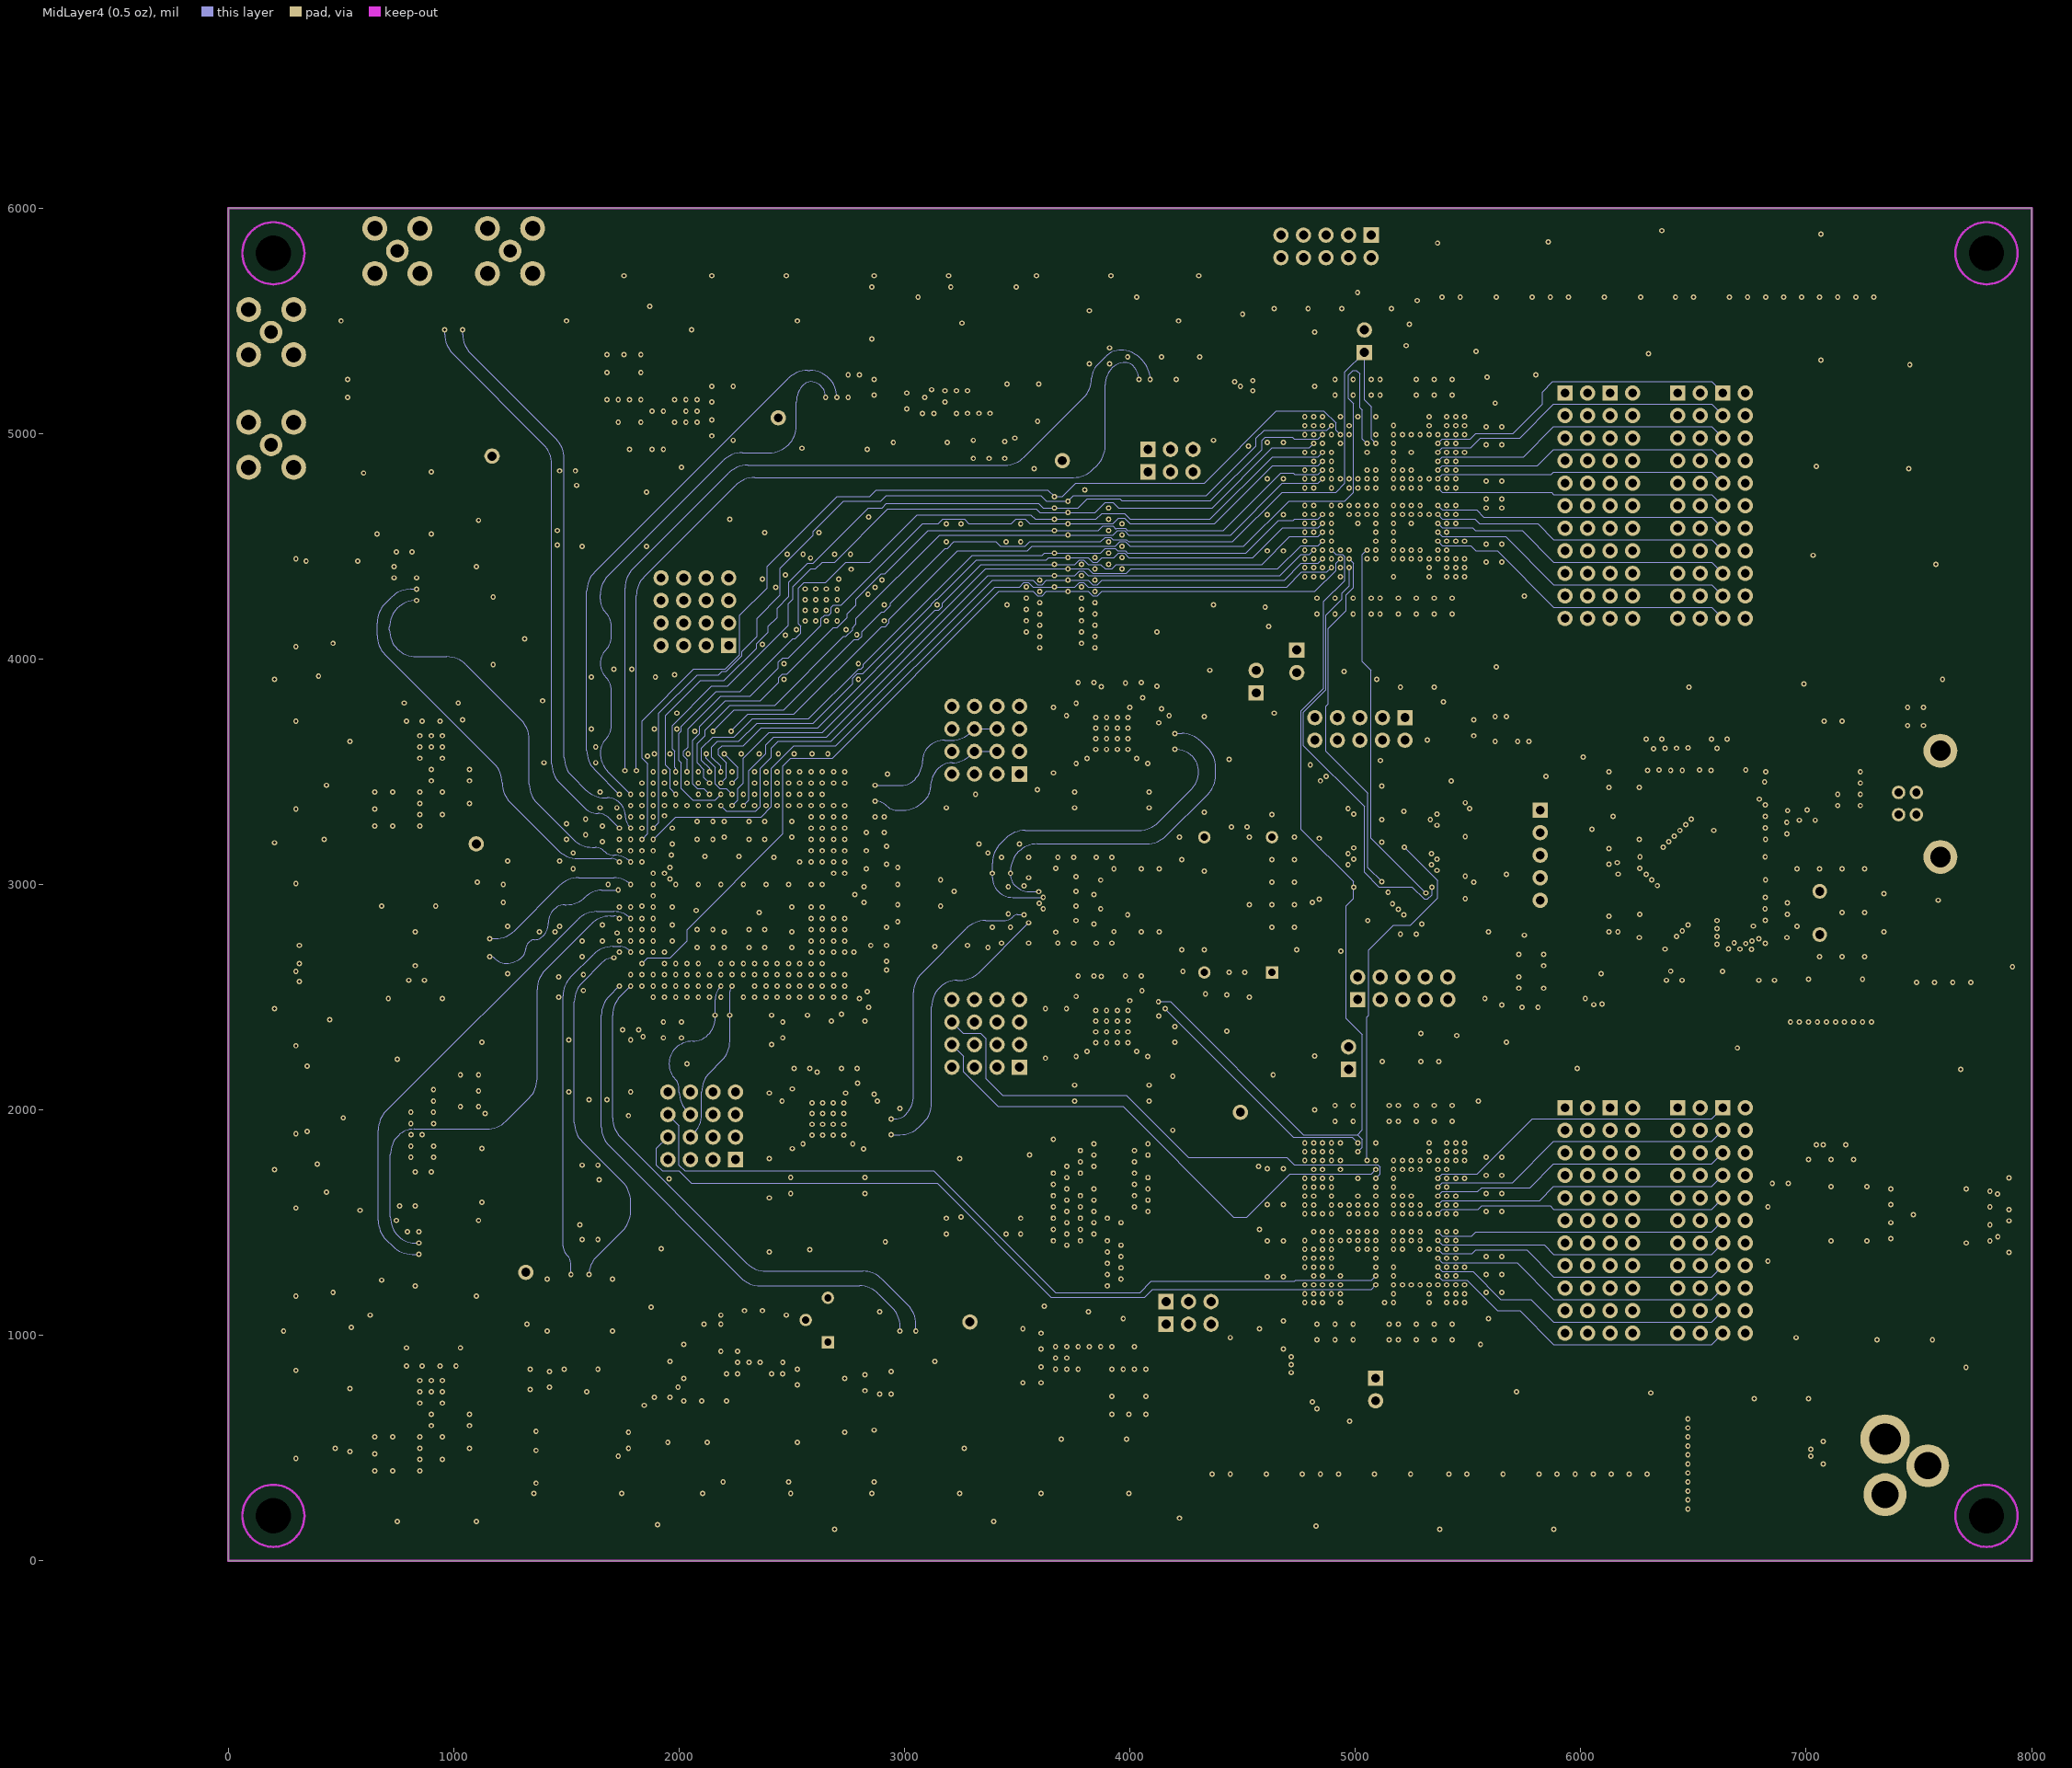
[diagram p11: MidLayer4 (0.5 oz)]
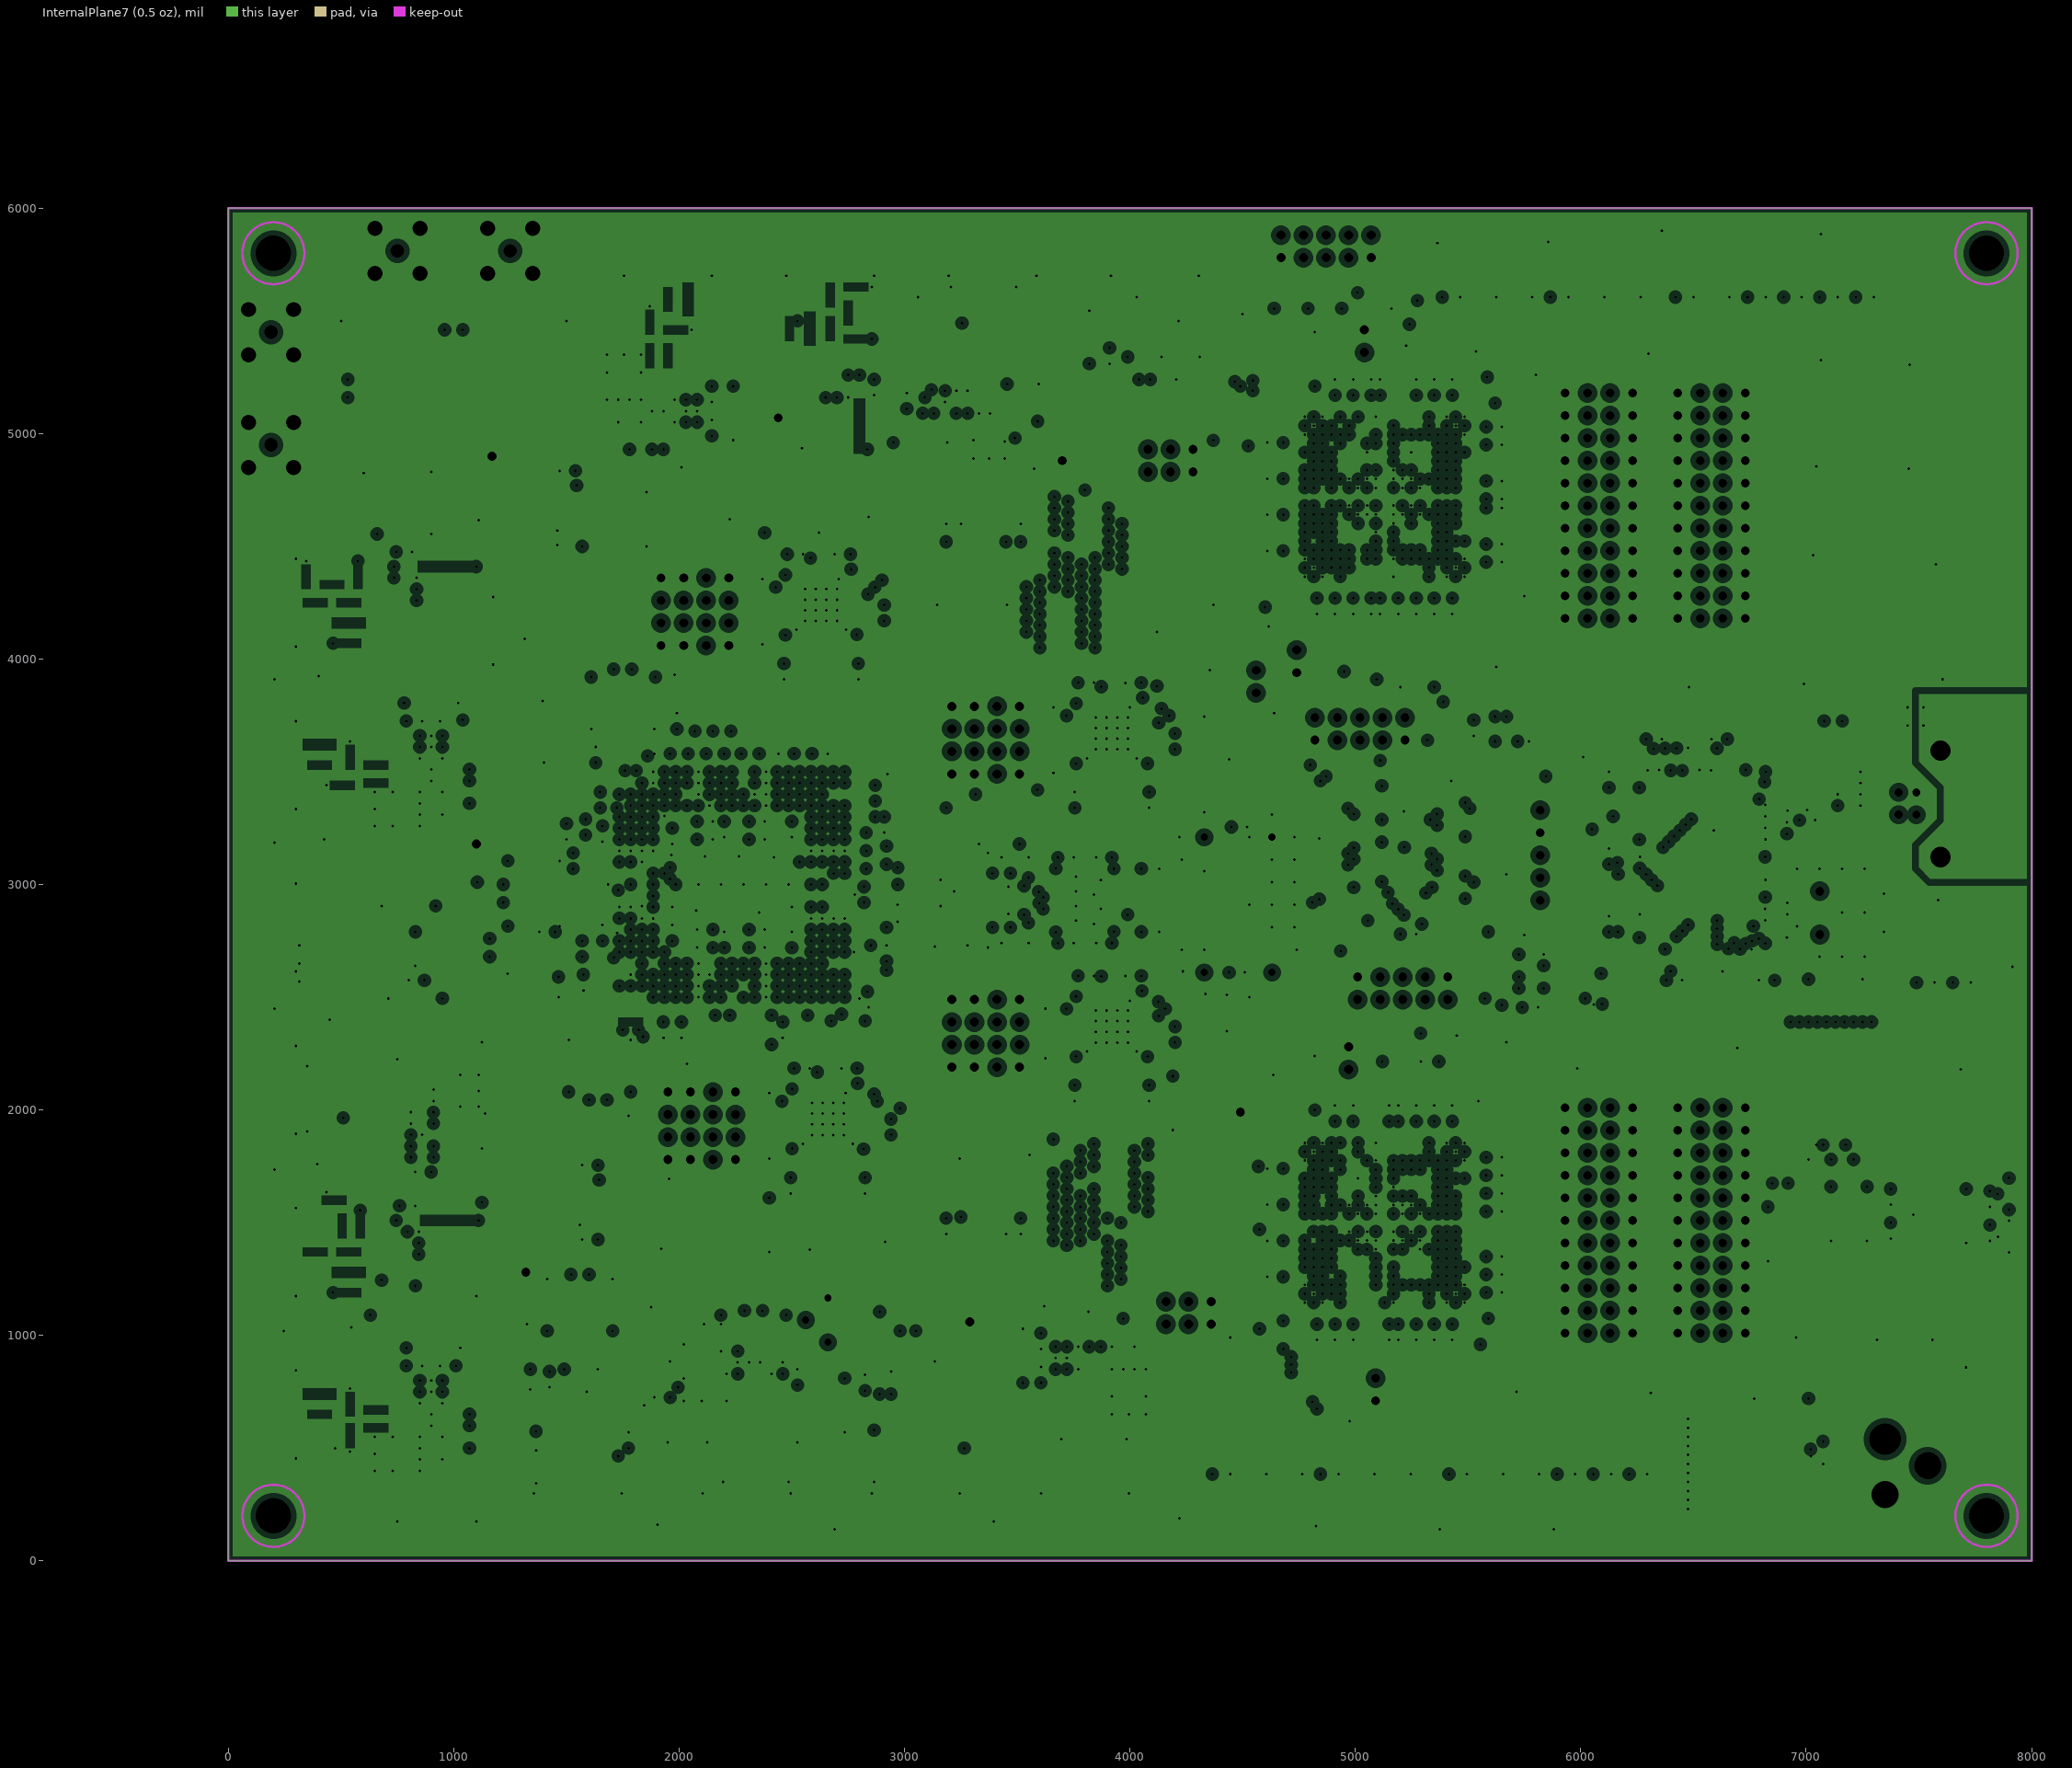
[diagram p12: InternalPlane7 (0.5 oz), clearances drawn from the general rule]
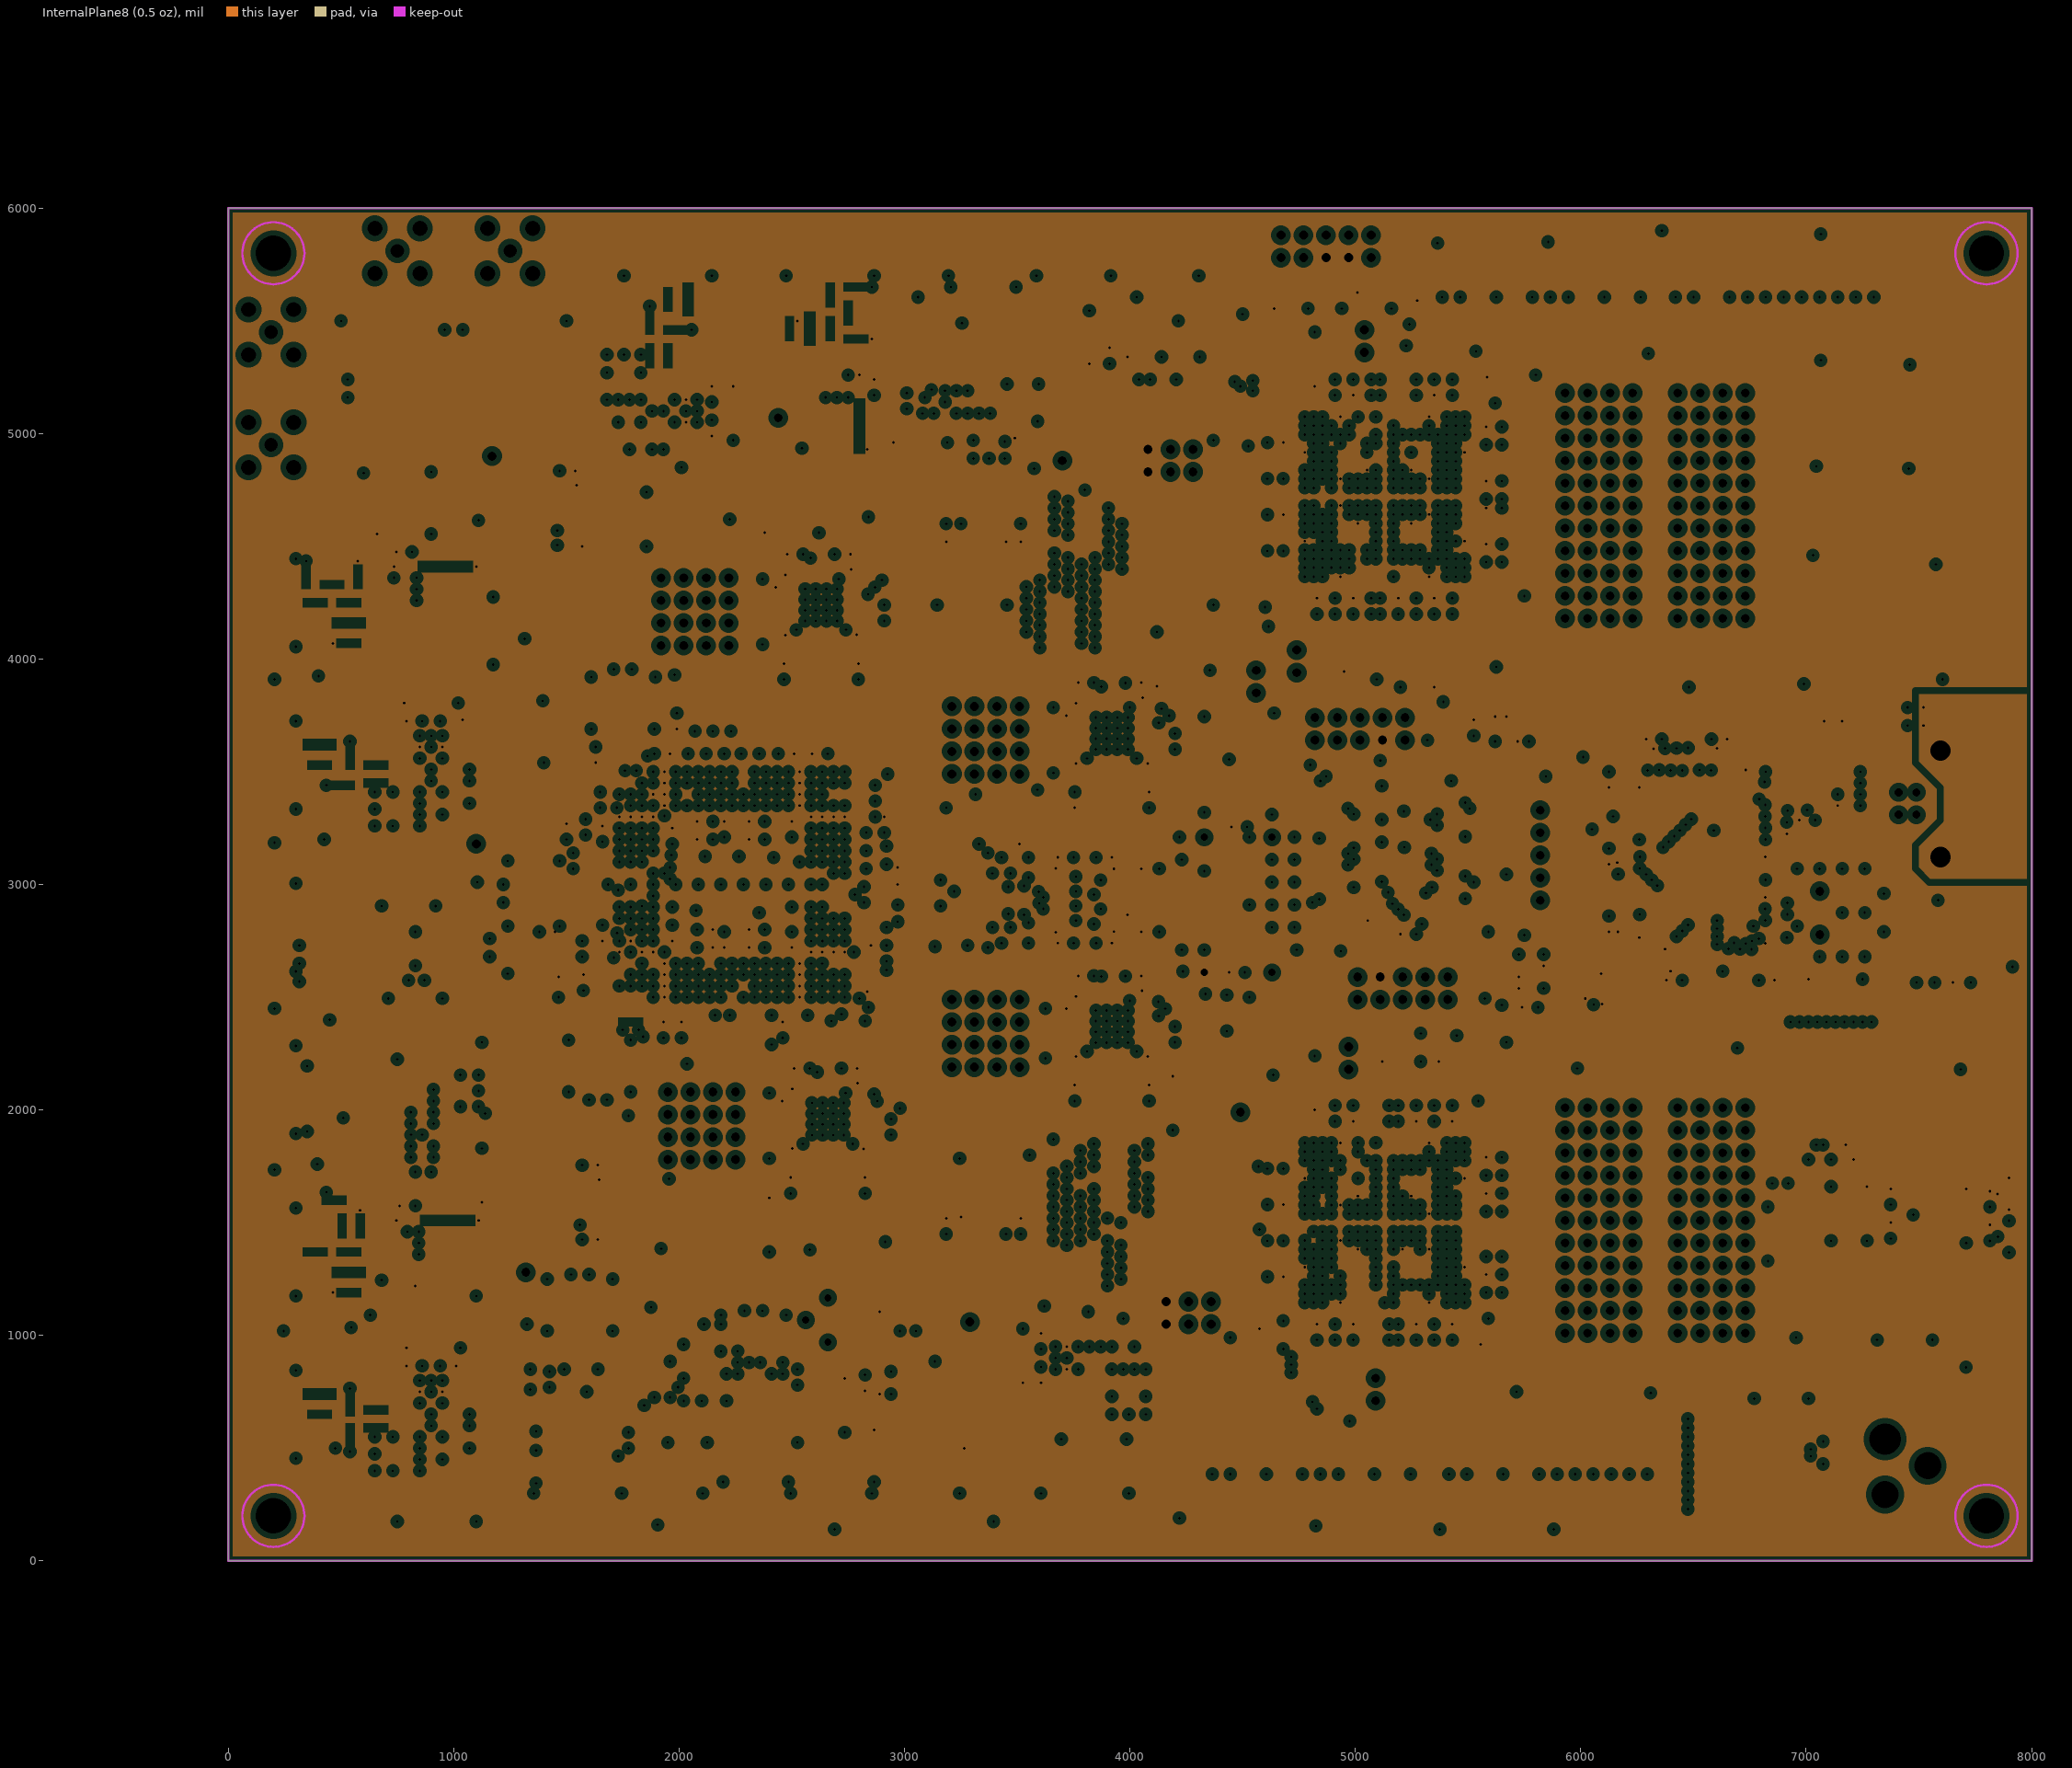
[diagram p13: InternalPlane8 (0.5 oz), clearances drawn from the general rule]

## Layer stack, top to bottom
TopLayer (1 oz): signal copper 1.4
Dielectric: prepreg 7, FR-408, Dk 3.8
InternalPlane1 (0.5 oz): plane copper 0.7, net GND
Dielectric: core 3, FR-408, Dk 3.8
InternalPlane2 (0.5 oz): plane copper 0.7, net GND
Dielectric: prepreg 6, FR-408, Dk 3.8
MidLayer1 (0.5 oz): signal copper 0.7
Dielectric: core 6, FR-408, Dk 3.8
InternalPlane3 (0.5 oz): plane copper 0.7, net GND
Dielectric: prepreg 6, FR-408, Dk 3.8
MidLayer2 (0.5 oz): signal copper 0.7
Dielectric: core 6, FR-408, Dk 3.8
InternalPlane4 (0.5 oz): plane copper 0.7, net +1.5VA
Dielectric: prepreg 7, FR-408, Dk 3.8
InternalPlane5 (0.5 oz): plane copper 0.7, net +5V
Dielectric: core 6, FR-408, Dk 3.8
MidLayer3 (0.5 oz): signal copper 0.7
Dielectric: prepreg 6, FR-408, Dk 3.8
InternalPlane6 (0.5 oz): plane copper 0.7, net GND
Dielectric: core 6, FR-408, Dk 3.8
MidLayer4 (0.5 oz): signal copper 0.7
Dielectric: prepreg 6, FR-408, Dk 3.8
InternalPlane7 (0.5 oz): plane copper 0.7, net GND
Dielectric: core 3, FR-408, Dk 3.8
InternalPlane8 (0.5 oz): plane copper 0.7, net +3.3V
Dielectric: prepreg 7, FR-408, Dk 3.8
BottomLayer (1 oz): signal copper 1.4

## Board outline
0,0 8000,0 8000,6000 0,6000 0,4000

## Design rules (kind name [scope] priority, off if disabled: settings)
Clearance Clearance_1 [InPolygon And OnBottomLayer] p1: gap=20
Clearance [All] p2: gap=5
ComponentClearance [All] p1: gap=10 collisioncheckmode=0
HoleSize [All] p1: absolutevalues=TRUE maxlimit=156 minlimit=12 maxpercent=80.000 minpercent=20.000
MatchedLengths MatchedLengths_FCLKD [InNetClass('FCLKD')] p1: tolerance=10 amplitude=200 gap=20 style=45-Degree
MatchedLengths MatchedLengths_FCLKC [InNetClass('FCLKC')] p2: tolerance=10 amplitude=200 gap=20 style=45-Degree
MatchedLengths MatchedLengths_FCLKB [InNetClass('FCLKB')] p3: tolerance=10 amplitude=200 gap=20 style=45-Degree
MatchedLengths MatchedLengths_FCLKA [InNetClass('FCLKA')] p4: tolerance=10 amplitude=200 gap=20 style=45-Degree
MatchedLengths MatchedLengths_IND1 [InNetClass('IND1')] p5: tolerance=10 amplitude=100 gap=20 style=Round
MatchedLengths MatchedLengths_USB [InNetClass('USB')] p6: tolerance=10 amplitude=100 gap=20 style=Round
MatchedLengths MatchedLengths_REFCLKD [InNetClass('REFCLKD')] p7: tolerance=10 amplitude=100 gap=20 style=Round
MatchedLengths MatchedLengths_REFCLKC [InNetClass('REFCLKC')] p8: tolerance=10 amplitude=100 gap=20 style=Round
MatchedLengths MatchedLengths_OUTB2 [InNetClass('OUTB2')] p9: tolerance=10 amplitude=100 gap=20 style=Round
MatchedLengths MatchedLengths_OUTB1 [InNetClass('OUTB1')] p10: tolerance=10 amplitude=100 gap=20 style=Round
MatchedLengths MatchedLengths_OUTA2 [InNetClass('OUTA2')] p11: tolerance=10 amplitude=100 gap=20 style=Round
MatchedLengths MatchedLengths_OUTA1 [InNetClass('OUTA1')] p12: tolerance=10 amplitude=100 gap=20 style=Round
MatchedLengths MatchedLengths_OSCILLATOR [InNetClass('OSCILLATOR')] p13: tolerance=10 amplitude=100 gap=20 style=Round
MatchedLengths MatchedLengths_IND2AC [InNetClass('IND2AC')] p14: tolerance=5 amplitude=100 gap=20 style=Round
MatchedLengths MatchedLengths_IND2 [InNetClass('IND2')] p15: tolerance=5 amplitude=100 gap=20 style=Round
MatchedLengths MatchedLengths_INC2AC [InNetClass('INC2AC')] p16: tolerance=5 amplitude=100 gap=20 style=Round
MatchedLengths MatchedLengths_INA1 [InNetClass('INA1')] p17: tolerance=10 amplitude=100 gap=20 style=Round
MatchedLengths MatchedLengths_INA2 [InNetClass('INA2')] p18: tolerance=10 amplitude=100 gap=20 style=Round
MatchedLengths MatchedLengths_INB2 [InNetClass('INB2')] p19: tolerance=5 amplitude=100 gap=20 style=Round
MatchedLengths MatchedLengths_INB2AC [InNetClass('INB2AC')] p20: tolerance=5 amplitude=100 gap=20 style=Round
MatchedLengths MatchedLengths_INC1 [InNetClass('INC1')] p21: tolerance=10 amplitude=100 gap=20 style=Round
MatchedLengths MatchedLengths_INC2 [InNetClass('INC2')] p22: tolerance=5 amplitude=100 gap=20 style=Round
MatchedLengths MatchedLengths_Q2 [InNetClass('Q2')] p23: tolerance=10 amplitude=100 gap=20 style=Round
MatchedLengths MatchedLengths_INB1 [InNetClass('INB1')] p24: tolerance=10 amplitude=100 gap=20 style=Round
MatchedLengths MatchedLengths_OUTD2AC [InNetClass('OUTD2AC')] p25: tolerance=5 amplitude=100 gap=20 style=Round
MatchedLengths MatchedLengths_Q0 [InNetClass('Q0')] p26: tolerance=10 amplitude=100 gap=20 style=Round
MatchedLengths MatchedLengths_Q1 [InNetClass('Q1')] p27: tolerance=10 amplitude=100 gap=20 style=Round
MatchedLengths MatchedLengths_Q3 [InNetClass('Q3')] p28: tolerance=10 amplitude=100 gap=20 style=Round
MatchedLengths MatchedLengths_REFCLKA [InNetClass('REFCLKA')] p29: tolerance=10 amplitude=100 gap=20 style=Round
MatchedLengths MatchedLengths_REFCLKB [InNetClass('REFCLKB')] p30: tolerance=10 amplitude=100 gap=20 style=Round
MatchedLengths MatchedLengths_OUTC2AC [InNetClass('OUTC2AC')] p31: tolerance=5 amplitude=100 gap=20 style=Round
MatchedLengths MatchedLengths_OUTC2 [InNetClass('OUTC2')] p32: tolerance=5 amplitude=100 gap=20 style=Round
MatchedLengths MatchedLengths_OUTC1 [InNetClass('OUTC1')] p33: tolerance=10 amplitude=100 gap=20 style=Round
MatchedLengths MatchedLengths_OUTD1 [InNetClass('OUTD1')] p34: tolerance=10 amplitude=100 gap=20 style=Round
MatchedLengths MatchedLengths_OUTD2 [InNetClass('OUTD2')] p35: tolerance=5 amplitude=100 gap=20 style=Round
MinimumAnnularRing [All] p1 off: minimumring=5
PlaneClearance PlaneClearance_12 [HoleSize <= 12] p1: clearance=10
PlaneClearance PlaneClearance_16 [HoleSize <= 16] p2: clearance=12
PlaneClearance PlaneClearance_22 [HoleSize <= 22] p3: clearance=14
PlaneClearance PlaneClearance_60 [HoleSize <= 60] p4: clearance=16
PlaneClearance PlaneClearance_100 [HoleSize <= 100] p5: clearance=18
PlaneClearance PlaneClearance_138 [HoleSize <= 138] p6: clearance=20
PlaneClearance PlaneClearance_177 [HoleSize <= 177] p7: clearance=22
PlaneClearance [All] p8: clearance=24
PlaneConnect PlaneConnect_12 [HoleSize <= 12] p1: planeconnectstyle=Relief reliefexpansion=7 reliefentries=4 reliefconductorwidth=10 reliefairgap=4
PlaneConnect PlaneConnect_16 [HoleSize <= 16] p2: planeconnectstyle=Relief reliefexpansion=7 reliefentries=4 reliefconductorwidth=12 reliefairgap=6
PlaneConnect PlaneConnect_22 [HoleSize <= 22] p3: planeconnectstyle=Relief reliefexpansion=8 reliefentries=4 reliefconductorwidth=14 reliefairgap=6
PlaneConnect PlaneConnect_60 [HoleSize <= 60] p4: planeconnectstyle=Relief reliefexpansion=10 reliefentries=4 reliefconductorwidth=16 reliefairgap=6
PlaneConnect PlaneConnect_100 [HoleSize <= 100] p5: planeconnectstyle=Relief reliefexpansion=10 reliefentries=4 reliefconductorwidth=18 reliefairgap=8
PlaneConnect PlaneConnect_138 [HoleSize <= 138] p6: planeconnectstyle=Relief reliefexpansion=10 reliefentries=4 reliefconductorwidth=20 reliefairgap=10
PlaneConnect [All] p7: planeconnectstyle=Relief reliefexpansion=10 reliefentries=4 reliefconductorwidth=22 reliefairgap=12
PolygonConnect [All] p1: connectstyle=Relief reliefconductorwidth=10 reliefentries=4 polygonreliefangle="90 Angle"
RoutingCorners [All] p1: cornerstyle=45-Degree minsetback=25 maxsetback=25
RoutingLayers [All] p1: top layer=Horizontal mid layer 1=Vertical mid layer 2=Horizontal mid layer 3="Not Used" mid layer 4="Not Used" bottom layer=Vertical
RoutingVias [All] p1: holewidth=12 width=24 viastyle="Through Hole" minholewidth=12 minwidth=24 maxholewidth=28 maxwidth=50
SMDNeckDown [All] p1 off: percent=75.000
SignalStimulus [All] p1: kind=1 level=0 starttime=10.00n stoptime=60.00n periodtime=100.00n
SolderMaskExpansion SolderMaskExpansion_Via [IsVia] p1: expansion=-50
SolderMaskExpansion [All] p2: expansion=2
SupplyNets GND [InNet('GND')] p1: voltage=0.000
SupplyNets 1.5V [InNet('+1.5V')] p2: voltage=1.500
SupplyNets 1.5VA [InNet('+1.5VA')] p3: voltage=1.500
SupplyNets 3.3V [InNet('+3.3V')] p4: voltage=3.300
SupplyNets 5V [InNet('+5V')] p5: voltage=5.000
TestPointUsage [All] p1 off: valid=0 allowmultiple=FALSE
Testpoint [All] p1: side=13 testpointundercomponent=FALSE minsize=25 maxsize=100 preferedsize=25 minholesize=0 maxholesize=40 preferedholesize=0 testpointgrid=1 style=1014 order=1234567890
Width "Schematic Width Constraint_162" [InNet('OSCD+_07')] p1: maxlimit=12.34 minlimit=0 preferedwidth=5.07 toplayer_minwidth=3.18 toplayer_prefwidth=12.34 midlayer1_minwidth=0.75 midlayer1_maxwidth=5.07 midlayer2_minwidth=0.75 midlayer2_maxwidth=5.07 midlayer3_minwidth=0.75 midlayer3_maxwidth=5.07 midlayer4_minwidth=0.75 midlayer4_maxwidth=5.07 bottomlayer_minwidth=3.18 bottomlayer_prefwidth=12.34 impedancedriven=TRUE minimp=50.000000 maximp=90.000000 favimp=50.000000
Width "Schematic Width Constraint_161" [InNet('OSCA+_07')] p2: maxlimit=12.34 minlimit=0 preferedwidth=5.07 toplayer_minwidth=3.18 toplayer_prefwidth=12.34 midlayer1_minwidth=0.75 midlayer1_maxwidth=5.07 midlayer2_minwidth=0.75 midlayer2_maxwidth=5.07 midlayer3_minwidth=0.75 midlayer3_maxwidth=5.07 midlayer4_minwidth=0.75 midlayer4_maxwidth=5.07 bottomlayer_minwidth=3.18 bottomlayer_prefwidth=12.34 impedancedriven=TRUE minimp=50.000000 maximp=90.000000 favimp=50.000000
Width "Schematic Width Constraint_160" [InNet('OSCB+_07')] p3: maxlimit=12.34 minlimit=0 preferedwidth=5.07 toplayer_minwidth=3.18 toplayer_prefwidth=12.34 midlayer1_minwidth=0.75 midlayer1_maxwidth=5.07 midlayer2_minwidth=0.75 midlayer2_maxwidth=5.07 midlayer3_minwidth=0.75 midlayer3_maxwidth=5.07 midlayer4_minwidth=0.75 midlayer4_maxwidth=5.07 bottomlayer_minwidth=3.18 bottomlayer_prefwidth=12.34 impedancedriven=TRUE minimp=50.000000 maximp=90.000000 favimp=50.000000
Width "Schematic Width Constraint_159" [InNet('NetR220_1')] p4: maxlimit=12.34 minlimit=0 preferedwidth=5.07 toplayer_minwidth=3.18 toplayer_prefwidth=12.34 midlayer1_minwidth=0.75 midlayer1_maxwidth=5.07 midlayer2_minwidth=0.75 midlayer2_maxwidth=5.07 midlayer3_minwidth=0.75 midlayer3_maxwidth=5.07 midlayer4_minwidth=0.75 midlayer4_maxwidth=5.07 bottomlayer_minwidth=3.18 bottomlayer_prefwidth=12.34 impedancedriven=TRUE minimp=50.000000 maximp=90.000000 favimp=50.000000
Width "Schematic Width Constraint_158" [InNet('NetR224_1')] p5: maxlimit=12.34 minlimit=0 preferedwidth=5.07 toplayer_minwidth=3.18 toplayer_prefwidth=12.34 midlayer1_minwidth=0.75 midlayer1_maxwidth=5.07 midlayer2_minwidth=0.75 midlayer2_maxwidth=5.07 midlayer3_minwidth=0.75 midlayer3_maxwidth=5.07 midlayer4_minwidth=0.75 midlayer4_maxwidth=5.07 bottomlayer_minwidth=3.18 bottomlayer_prefwidth=12.34 impedancedriven=TRUE minimp=50.000000 maximp=90.000000 favimp=50.000000
Width "Schematic Width Constraint_157" [InNet('NetR233_1')] p6: maxlimit=12.34 minlimit=0 preferedwidth=5.07 toplayer_minwidth=3.18 toplayer_prefwidth=12.34 midlayer1_minwidth=0.75 midlayer1_maxwidth=5.07 midlayer2_minwidth=0.75 midlayer2_maxwidth=5.07 midlayer3_minwidth=0.75 midlayer3_maxwidth=5.07 midlayer4_minwidth=0.75 midlayer4_maxwidth=5.07 bottomlayer_minwidth=3.18 bottomlayer_prefwidth=12.34 impedancedriven=TRUE minimp=50.000000 maximp=90.000000 favimp=50.000000
Width "Schematic Width Constraint_156" [InNet('NetR228_1')] p7: maxlimit=12.34 minlimit=0 preferedwidth=5.07 toplayer_minwidth=3.18 toplayer_prefwidth=12.34 midlayer1_minwidth=0.75 midlayer1_maxwidth=5.07 midlayer2_minwidth=0.75 midlayer2_maxwidth=5.07 midlayer3_minwidth=0.75 midlayer3_maxwidth=5.07 midlayer4_minwidth=0.75 midlayer4_maxwidth=5.07 bottomlayer_minwidth=3.18 bottomlayer_prefwidth=12.34 impedancedriven=TRUE minimp=50.000000 maximp=90.000000 favimp=50.000000
Width "Schematic Width Constraint_155" [InNet('NetR229_1')] p8: maxlimit=12.34 minlimit=0 preferedwidth=5.07 toplayer_minwidth=3.18 toplayer_prefwidth=12.34 midlayer1_minwidth=0.75 midlayer1_maxwidth=5.07 midlayer2_minwidth=0.75 midlayer2_maxwidth=5.07 midlayer3_minwidth=0.75 midlayer3_maxwidth=5.07 midlayer4_minwidth=0.75 midlayer4_maxwidth=5.07 bottomlayer_minwidth=3.18 bottomlayer_prefwidth=12.34 impedancedriven=TRUE minimp=50.000000 maximp=90.000000 favimp=50.000000
Width "Schematic Width Constraint_154" [InNet('OSCB-_07')] p9: maxlimit=12.34 minlimit=0 preferedwidth=5.07 toplayer_minwidth=3.18 toplayer_prefwidth=12.34 midlayer1_minwidth=0.75 midlayer1_maxwidth=5.07 midlayer2_minwidth=0.75 midlayer2_maxwidth=5.07 midlayer3_minwidth=0.75 midlayer3_maxwidth=5.07 midlayer4_minwidth=0.75 midlayer4_maxwidth=5.07 bottomlayer_minwidth=3.18 bottomlayer_prefwidth=12.34 impedancedriven=TRUE minimp=50.000000 maximp=90.000000 favimp=50.000000
Width "Schematic Width Constraint_153" [InNet('OSCA-_07')] p10: maxlimit=12.34 minlimit=0 preferedwidth=5.07 toplayer_minwidth=3.18 toplayer_prefwidth=12.34 midlayer1_minwidth=0.75 midlayer1_maxwidth=5.07 midlayer2_minwidth=0.75 midlayer2_maxwidth=5.07 midlayer3_minwidth=0.75 midlayer3_maxwidth=5.07 midlayer4_minwidth=0.75 midlayer4_maxwidth=5.07 bottomlayer_minwidth=3.18 bottomlayer_prefwidth=12.34 impedancedriven=TRUE minimp=50.000000 maximp=90.000000 favimp=50.000000
Width "Schematic Width Constraint_152" [InNet('OSCC-_07')] p11: maxlimit=12.34 minlimit=0 preferedwidth=5.07 toplayer_minwidth=3.18 toplayer_prefwidth=12.34 midlayer1_minwidth=0.75 midlayer1_maxwidth=5.07 midlayer2_minwidth=0.75 midlayer2_maxwidth=5.07 midlayer3_minwidth=0.75 midlayer3_maxwidth=5.07 midlayer4_minwidth=0.75 midlayer4_maxwidth=5.07 bottomlayer_minwidth=3.18 bottomlayer_prefwidth=12.34 impedancedriven=TRUE minimp=50.000000 maximp=90.000000 favimp=50.000000
Width "Schematic Width Constraint_151" [InNet('OSCC+_07')] p12: maxlimit=12.34 minlimit=0 preferedwidth=5.07 toplayer_minwidth=3.18 toplayer_prefwidth=12.34 midlayer1_minwidth=0.75 midlayer1_maxwidth=5.07 midlayer2_minwidth=0.75 midlayer2_maxwidth=5.07 midlayer3_minwidth=0.75 midlayer3_maxwidth=5.07 midlayer4_minwidth=0.75 midlayer4_maxwidth=5.07 bottomlayer_minwidth=3.18 bottomlayer_prefwidth=12.34 impedancedriven=TRUE minimp=50.000000 maximp=90.000000 favimp=50.000000
Width "Schematic Width Constraint_150" [InNet('NetR225_1')] p13: maxlimit=12.34 minlimit=0 preferedwidth=5.07 toplayer_minwidth=3.18 toplayer_prefwidth=12.34 midlayer1_minwidth=0.75 midlayer1_maxwidth=5.07 midlayer2_minwidth=0.75 midlayer2_maxwidth=5.07 midlayer3_minwidth=0.75 midlayer3_maxwidth=5.07 midlayer4_minwidth=0.75 midlayer4_maxwidth=5.07 bottomlayer_minwidth=3.18 bottomlayer_prefwidth=12.34 impedancedriven=TRUE minimp=50.000000 maximp=90.000000 favimp=50.000000
Width "Schematic Width Constraint_149" [InNet('NetR221_1')] p14: maxlimit=12.34 minlimit=0 preferedwidth=5.07 toplayer_minwidth=3.18 toplayer_prefwidth=12.34 midlayer1_minwidth=0.75 midlayer1_maxwidth=5.07 midlayer2_minwidth=0.75 midlayer2_maxwidth=5.07 midlayer3_minwidth=0.75 midlayer3_maxwidth=5.07 midlayer4_minwidth=0.75 midlayer4_maxwidth=5.07 bottomlayer_minwidth=3.18 bottomlayer_prefwidth=12.34 impedancedriven=TRUE minimp=50.000000 maximp=90.000000 favimp=50.000000
Width "Schematic Width Constraint_148" [InNet('NetR232_1')] p15: maxlimit=12.34 minlimit=0 preferedwidth=5.07 toplayer_minwidth=3.18 toplayer_prefwidth=12.34 midlayer1_minwidth=0.75 midlayer1_maxwidth=5.07 midlayer2_minwidth=0.75 midlayer2_maxwidth=5.07 midlayer3_minwidth=0.75 midlayer3_maxwidth=5.07 midlayer4_minwidth=0.75 midlayer4_maxwidth=5.07 bottomlayer_minwidth=3.18 bottomlayer_prefwidth=12.34 impedancedriven=TRUE minimp=50.000000 maximp=90.000000 favimp=50.000000
Width "Schematic Width Constraint_147" [InNet('OSCD-_07')] p16: maxlimit=12.34 minlimit=0 preferedwidth=5.07 toplayer_minwidth=3.18 toplayer_prefwidth=12.34 midlayer1_minwidth=0.75 midlayer1_maxwidth=5.07 midlayer2_minwidth=0.75 midlayer2_maxwidth=5.07 midlayer3_minwidth=0.75 midlayer3_maxwidth=5.07 midlayer4_minwidth=0.75 midlayer4_maxwidth=5.07 bottomlayer_minwidth=3.18 bottomlayer_prefwidth=12.34 impedancedriven=TRUE minimp=50.000000 maximp=90.000000 favimp=50.000000
Width "Schematic Width Constraint_146" [InNet('NetC200_1')] p17: maxlimit=5.56 minlimit=0 preferedwidth=1.76 toplayer_minwidth=5.56 toplayer_prefwidth=5.56 midlayer1_minwidth=1.76 midlayer1_maxwidth=1.76 midlayer2_minwidth=1.76 midlayer2_maxwidth=1.76 midlayer3_minwidth=1.76 midlayer3_maxwidth=1.76 midlayer4_minwidth=1.76 midlayer4_maxwidth=1.76 bottomlayer_minwidth=5.56 bottomlayer_prefwidth=5.56 impedancedriven=TRUE minimp=75.000000 maximp=75.000000 favimp=75.000000
Width "Schematic Width Constraint_145" [InNet('NetC199_1')] p18: maxlimit=5.56 minlimit=0 preferedwidth=1.76 toplayer_minwidth=5.56 toplayer_prefwidth=5.56 midlayer1_minwidth=1.76 midlayer1_maxwidth=1.76 midlayer2_minwidth=1.76 midlayer2_maxwidth=1.76 midlayer3_minwidth=1.76 midlayer3_maxwidth=1.76 midlayer4_minwidth=1.76 midlayer4_maxwidth=1.76 bottomlayer_minwidth=5.56 bottomlayer_prefwidth=5.56 impedancedriven=TRUE minimp=75.000000 maximp=75.000000 favimp=75.000000
Width "Schematic Width Constraint_144" [InNet('NetC201_1')] p19: maxlimit=5.56 minlimit=0 preferedwidth=1.76 toplayer_minwidth=5.56 toplayer_prefwidth=5.56 midlayer1_minwidth=1.76 midlayer1_maxwidth=1.76 midlayer2_minwidth=1.76 midlayer2_maxwidth=1.76 midlayer3_minwidth=1.76 midlayer3_maxwidth=1.76 midlayer4_minwidth=1.76 midlayer4_maxwidth=1.76 bottomlayer_minwidth=5.56 bottomlayer_prefwidth=5.56 impedancedriven=TRUE minimp=75.000000 maximp=75.000000 favimp=75.000000
Width "Schematic Width Constraint_135" [InNet('NetC202_1')] p20: maxlimit=5.56 minlimit=0 preferedwidth=1.76 toplayer_minwidth=5.56 toplayer_prefwidth=5.56 midlayer1_minwidth=1.76 midlayer1_maxwidth=1.76 midlayer2_minwidth=1.76 midlayer2_maxwidth=1.76 midlayer3_minwidth=1.76 midlayer3_maxwidth=1.76 midlayer4_minwidth=1.76 midlayer4_maxwidth=1.76 bottomlayer_minwidth=5.56 bottomlayer_prefwidth=5.56 impedancedriven=TRUE minimp=75.000000 maximp=75.000000 favimp=75.000000
Width "Schematic Width Constraint_143" [InNet('NetR43_2')] p21: maxlimit=12.34 minlimit=0 preferedwidth=5.07 toplayer_minwidth=3.18 toplayer_prefwidth=12.34 midlayer1_minwidth=0.75 midlayer1_maxwidth=5.07 midlayer2_minwidth=0.75 midlayer2_maxwidth=5.07 midlayer3_minwidth=0.75 midlayer3_maxwidth=5.07 midlayer4_minwidth=0.75 midlayer4_maxwidth=5.07 bottomlayer_minwidth=3.18 bottomlayer_prefwidth=12.34 impedancedriven=TRUE minimp=50.000000 maximp=90.000000 favimp=50.000000
Width "Schematic Width Constraint_142" [InNet('NetR44_2')] p22: maxlimit=12.34 minlimit=0 preferedwidth=5.07 toplayer_minwidth=3.18 toplayer_prefwidth=12.34 midlayer1_minwidth=0.75 midlayer1_maxwidth=5.07 midlayer2_minwidth=0.75 midlayer2_maxwidth=5.07 midlayer3_minwidth=0.75 midlayer3_maxwidth=5.07 midlayer4_minwidth=0.75 midlayer4_maxwidth=5.07 bottomlayer_minwidth=3.18 bottomlayer_prefwidth=12.34 impedancedriven=TRUE minimp=50.000000 maximp=90.000000 favimp=50.000000
Width Width_USB [InNetClass('USB')] p23: maxlimit=13.59 minlimit=13.59 preferedwidth=13.59
Width "Schematic Width Constraint_141" [InNet('NetR31_1')] p24: maxlimit=12.34 minlimit=0 preferedwidth=5.07 toplayer_minwidth=5.56 toplayer_prefwidth=12.34 midlayer1_minwidth=1.76 midlayer1_maxwidth=5.07 midlayer2_minwidth=1.76 midlayer2_maxwidth=5.07 midlayer3_minwidth=1.76 midlayer3_maxwidth=5.07 midlayer4_minwidth=1.76 midlayer4_maxwidth=5.07 bottomlayer_minwidth=5.56 bottomlayer_prefwidth=12.34 impedancedriven=TRUE minimp=50.000000 maximp=75.000000 favimp=50.000000
Width "Schematic Width Constraint_140" [InNet('NetJP11_3')] p25: maxlimit=12.34 minlimit=0 preferedwidth=5.07 toplayer_minwidth=2.05 toplayer_prefwidth=12.34 midlayer1_minwidth=0.3 midlayer1_maxwidth=5.07 midlayer2_minwidth=0.3 midlayer2_maxwidth=5.07 midlayer3_minwidth=0.3 midlayer3_maxwidth=5.07 midlayer4_minwidth=0.3 midlayer4_maxwidth=5.07 bottomlayer_minwidth=2.05 bottomlayer_prefwidth=12.34 impedancedriven=TRUE minimp=50.000000 maximp=100.000000 favimp=50.000000
Width "Schematic Width Constraint_139" [InNet('NetJP13_3')] p26: maxlimit=12.34 minlimit=0 preferedwidth=5.07 toplayer_minwidth=2.05 toplayer_prefwidth=12.34 midlayer1_minwidth=0.3 midlayer1_maxwidth=5.07 midlayer2_minwidth=0.3 midlayer2_maxwidth=5.07 midlayer3_minwidth=0.3 midlayer3_maxwidth=5.07 midlayer4_minwidth=0.3 midlayer4_maxwidth=5.07 bottomlayer_minwidth=2.05 bottomlayer_prefwidth=12.34 impedancedriven=TRUE minimp=50.000000 maximp=100.000000 favimp=50.000000
Width "Schematic Width Constraint_138" [InNet('NetR104_2')] p27: maxlimit=5.56 minlimit=0 preferedwidth=1.76 toplayer_minwidth=5.56 toplayer_prefwidth=5.56 midlayer1_minwidth=1.76 midlayer1_maxwidth=1.76 midlayer2_minwidth=1.76 midlayer2_maxwidth=1.76 midlayer3_minwidth=1.76 midlayer3_maxwidth=1.76 midlayer4_minwidth=1.76 midlayer4_maxwidth=1.76 bottomlayer_minwidth=5.56 bottomlayer_prefwidth=5.56 impedancedriven=TRUE minimp=75.000000 maximp=75.000000 favimp=75.000000
Width "Schematic Width Constraint_137" [InNet('NetJP10_5')] p28: maxlimit=12.34 minlimit=0 preferedwidth=5.07 toplayer_minwidth=12.34 toplayer_prefwidth=12.34 midlayer1_minwidth=5.07 midlayer1_maxwidth=5.07 midlayer2_minwidth=5.07 midlayer2_maxwidth=5.07 midlayer3_minwidth=5.07 midlayer3_maxwidth=5.07 midlayer4_minwidth=5.07 midlayer4_maxwidth=5.07 bottomlayer_minwidth=12.34 bottomlayer_prefwidth=12.34 impedancedriven=TRUE minimp=50.000000 maximp=50.000000 favimp=50.000000
Width "Schematic Width Constraint_136" [InNet('NetC103_1')] p29: maxlimit=5.56 minlimit=0 preferedwidth=1.76 toplayer_minwidth=5.56 toplayer_prefwidth=5.56 midlayer1_minwidth=1.76 midlayer1_maxwidth=1.76 midlayer2_minwidth=1.76 midlayer2_maxwidth=1.76 midlayer3_minwidth=1.76 midlayer3_maxwidth=1.76 midlayer4_minwidth=1.76 midlayer4_maxwidth=1.76 bottomlayer_minwidth=5.56 bottomlayer_prefwidth=5.56 impedancedriven=TRUE minimp=75.000000 maximp=75.000000 favimp=75.000000
Width "Schematic Width Constraint_134" [InNet('NetC74_2')] p30: maxlimit=5.56 minlimit=0 preferedwidth=1.76 toplayer_minwidth=5.56 toplayer_prefwidth=5.56 midlayer1_minwidth=1.76 midlayer1_maxwidth=1.76 midlayer2_minwidth=1.76 midlayer2_maxwidth=1.76 midlayer3_minwidth=1.76 midlayer3_maxwidth=1.76 midlayer4_minwidth=1.76 midlayer4_maxwidth=1.76 bottomlayer_minwidth=5.56 bottomlayer_prefwidth=5.56 impedancedriven=TRUE minimp=75.000000 maximp=75.000000 favimp=75.000000
Width "Schematic Width Constraint_133" [InNet('NetJ7_S')] p31: maxlimit=5.56 minlimit=0 preferedwidth=1.76 toplayer_minwidth=5.56 toplayer_prefwidth=5.56 midlayer1_minwidth=1.76 midlayer1_maxwidth=1.76 midlayer2_minwidth=1.76 midlayer2_maxwidth=1.76 midlayer3_minwidth=1.76 midlayer3_maxwidth=1.76 midlayer4_minwidth=1.76 midlayer4_maxwidth=1.76 bottomlayer_minwidth=5.56 bottomlayer_prefwidth=5.56 impedancedriven=TRUE minimp=75.000000 maximp=75.000000 favimp=75.000000
Width "Schematic Width Constraint_132" [InNet('NetJ11_S')] p32: maxlimit=5.56 minlimit=0 preferedwidth=1.76 toplayer_minwidth=5.56 toplayer_prefwidth=5.56 midlayer1_minwidth=1.76 midlayer1_maxwidth=1.76 midlayer2_minwidth=1.76 midlayer2_maxwidth=1.76 midlayer3_minwidth=1.76 midlayer3_maxwidth=1.76 midlayer4_minwidth=1.76 midlayer4_maxwidth=1.76 bottomlayer_minwidth=5.56 bottomlayer_prefwidth=5.56 impedancedriven=TRUE minimp=75.000000 maximp=75.000000 favimp=75.000000
Width "Schematic Width Constraint_131" [InNet('INA1-')] p33: maxlimit=12.34 minlimit=0 preferedwidth=5.07 toplayer_minwidth=12.34 toplayer_prefwidth=12.34 midlayer1_minwidth=5.07 midlayer1_maxwidth=5.07 midlayer2_minwidth=5.07 midlayer2_maxwidth=5.07 midlayer3_minwidth=5.07 midlayer3_maxwidth=5.07 midlayer4_minwidth=5.07 midlayer4_maxwidth=5.07 bottomlayer_minwidth=12.34 bottomlayer_prefwidth=12.34 impedancedriven=TRUE minimp=50.000000 maximp=50.000000 favimp=50.000000
Width "Schematic Width Constraint_130" [InNet('INA2+')] p34: maxlimit=12.34 minlimit=0 preferedwidth=5.07 toplayer_minwidth=12.34 toplayer_prefwidth=12.34 midlayer1_minwidth=5.07 midlayer1_maxwidth=5.07 midlayer2_minwidth=5.07 midlayer2_maxwidth=5.07 midlayer3_minwidth=5.07 midlayer3_maxwidth=5.07 midlayer4_minwidth=5.07 midlayer4_maxwidth=5.07 bottomlayer_minwidth=12.34 bottomlayer_prefwidth=12.34 impedancedriven=TRUE minimp=50.000000 maximp=50.000000 favimp=50.000000
Width "Schematic Width Constraint_129" [InNet('INC1+')] p35: maxlimit=12.34 minlimit=0 preferedwidth=5.07 toplayer_minwidth=12.34 toplayer_prefwidth=12.34 midlayer1_minwidth=5.07 midlayer1_maxwidth=5.07 midlayer2_minwidth=5.07 midlayer2_maxwidth=5.07 midlayer3_minwidth=5.07 midlayer3_maxwidth=5.07 midlayer4_minwidth=5.07 midlayer4_maxwidth=5.07 bottomlayer_minwidth=12.34 bottomlayer_prefwidth=12.34 impedancedriven=TRUE minimp=50.000000 maximp=50.000000 favimp=50.000000
Width "Schematic Width Constraint_128" [InNet('INC1-')] p36: maxlimit=12.34 minlimit=0 preferedwidth=5.07 toplayer_minwidth=12.34 toplayer_prefwidth=12.34 midlayer1_minwidth=5.07 midlayer1_maxwidth=5.07 midlayer2_minwidth=5.07 midlayer2_maxwidth=5.07 midlayer3_minwidth=5.07 midlayer3_maxwidth=5.07 midlayer4_minwidth=5.07 midlayer4_maxwidth=5.07 bottomlayer_minwidth=12.34 bottomlayer_prefwidth=12.34 impedancedriven=TRUE minimp=50.000000 maximp=50.000000 favimp=50.000000
Width "Schematic Width Constraint_127" [InNet('NetC71_2')] p37: maxlimit=12.34 minlimit=0 preferedwidth=5.07 toplayer_minwidth=12.34 toplayer_prefwidth=12.34 midlayer1_minwidth=5.07 midlayer1_maxwidth=5.07 midlayer2_minwidth=5.07 midlayer2_maxwidth=5.07 midlayer3_minwidth=5.07 midlayer3_maxwidth=5.07 midlayer4_minwidth=5.07 midlayer4_maxwidth=5.07 bottomlayer_minwidth=12.34 bottomlayer_prefwidth=12.34 impedancedriven=TRUE minimp=50.000000 maximp=50.000000 favimp=50.000000
Width "Schematic Width Constraint_126" [InNet('REFCLKD-')] p38: maxlimit=12.34 minlimit=0 preferedwidth=5.07 toplayer_minwidth=12.34 toplayer_prefwidth=12.34 midlayer1_minwidth=5.07 midlayer1_maxwidth=5.07 midlayer2_minwidth=5.07 midlayer2_maxwidth=5.07 midlayer3_minwidth=5.07 midlayer3_maxwidth=5.07 midlayer4_minwidth=5.07 midlayer4_maxwidth=5.07 bottomlayer_minwidth=12.34 bottomlayer_prefwidth=12.34 impedancedriven=TRUE minimp=50.000000 maximp=50.000000 favimp=50.000000
Width "Schematic Width Constraint_125" [InNet('NetC67_2')] p39: maxlimit=12.34 minlimit=0 preferedwidth=5.07 toplayer_minwidth=12.34 toplayer_prefwidth=12.34 midlayer1_minwidth=5.07 midlayer1_maxwidth=5.07 midlayer2_minwidth=5.07 midlayer2_maxwidth=5.07 midlayer3_minwidth=5.07 midlayer3_maxwidth=5.07 midlayer4_minwidth=5.07 midlayer4_maxwidth=5.07 bottomlayer_minwidth=12.34 bottomlayer_prefwidth=12.34 impedancedriven=TRUE minimp=50.000000 maximp=50.000000 favimp=50.000000
Width "Schematic Width Constraint_124" [InNet('NetC90_2')] p40: maxlimit=12.34 minlimit=0 preferedwidth=5.07 toplayer_minwidth=12.34 toplayer_prefwidth=12.34 midlayer1_minwidth=5.07 midlayer1_maxwidth=5.07 midlayer2_minwidth=5.07 midlayer2_maxwidth=5.07 midlayer3_minwidth=5.07 midlayer3_maxwidth=5.07 midlayer4_minwidth=5.07 midlayer4_maxwidth=5.07 bottomlayer_minwidth=12.34 bottomlayer_prefwidth=12.34 impedancedriven=TRUE minimp=50.000000 maximp=50.000000 favimp=50.000000
Width "Schematic Width Constraint_123" [InNet('IND2+')] p41: maxlimit=12.34 minlimit=0 preferedwidth=5.07 toplayer_minwidth=12.34 toplayer_prefwidth=12.34 midlayer1_minwidth=5.07 midlayer1_maxwidth=5.07 midlayer2_minwidth=5.07 midlayer2_maxwidth=5.07 midlayer3_minwidth=5.07 midlayer3_maxwidth=5.07 midlayer4_minwidth=5.07 midlayer4_maxwidth=5.07 bottomlayer_minwidth=12.34 bottomlayer_prefwidth=12.34 impedancedriven=TRUE minimp=50.000000 maximp=50.000000 favimp=50.000000
Width "Schematic Width Constraint_122" [InNet('NetJ13_S')] p42: maxlimit=5.56 minlimit=0 preferedwidth=1.76 toplayer_minwidth=5.56 toplayer_prefwidth=5.56 midlayer1_minwidth=1.76 midlayer1_maxwidth=1.76 midlayer2_minwidth=1.76 midlayer2_maxwidth=1.76 midlayer3_minwidth=1.76 midlayer3_maxwidth=1.76 midlayer4_minwidth=1.76 midlayer4_maxwidth=1.76 bottomlayer_minwidth=5.56 bottomlayer_prefwidth=5.56 impedancedriven=TRUE minimp=75.000000 maximp=75.000000 favimp=75.000000
Width "Schematic Width Constraint_121" [InNet('NetC91_1')] p43: maxlimit=5.56 minlimit=0 preferedwidth=1.76 toplayer_minwidth=5.56 toplayer_prefwidth=5.56 midlayer1_minwidth=1.76 midlayer1_maxwidth=1.76 midlayer2_minwidth=1.76 midlayer2_maxwidth=1.76 midlayer3_minwidth=1.76 midlayer3_maxwidth=1.76 midlayer4_minwidth=1.76 midlayer4_maxwidth=1.76 bottomlayer_minwidth=5.56 bottomlayer_prefwidth=5.56 impedancedriven=TRUE minimp=75.000000 maximp=75.000000 favimp=75.000000
Width "Schematic Width Constraint_120" [InNet('NetC68_2')] p44: maxlimit=12.34 minlimit=0 preferedwidth=5.07 toplayer_minwidth=12.34 toplayer_prefwidth=12.34 midlayer1_minwidth=5.07 midlayer1_maxwidth=5.07 midlayer2_minwidth=5.07 midlayer2_maxwidth=5.07 midlayer3_minwidth=5.07 midlayer3_maxwidth=5.07 midlayer4_minwidth=5.07 midlayer4_maxwidth=5.07 bottomlayer_minwidth=12.34 bottomlayer_prefwidth=12.34 impedancedriven=TRUE minimp=50.000000 maximp=50.000000 favimp=50.000000
Width "Schematic Width Constraint_119" [InNet('NetC106_2')] p45: maxlimit=5.56 minlimit=0 preferedwidth=1.76 toplayer_minwidth=5.56 toplayer_prefwidth=5.56 midlayer1_minwidth=1.76 midlayer1_maxwidth=1.76 midlayer2_minwidth=1.76 midlayer2_maxwidth=1.76 midlayer3_minwidth=1.76 midlayer3_maxwidth=1.76 midlayer4_minwidth=1.76 midlayer4_maxwidth=1.76 bottomlayer_minwidth=5.56 bottomlayer_prefwidth=5.56 impedancedriven=TRUE minimp=75.000000 maximp=75.000000 favimp=75.000000
Width "Schematic Width Constraint_118" [InNet('NetC108_1')] p46: maxlimit=5.56 minlimit=0 preferedwidth=1.76 toplayer_minwidth=5.56 toplayer_prefwidth=5.56 midlayer1_minwidth=1.76 midlayer1_maxwidth=1.76 midlayer2_minwidth=1.76 midlayer2_maxwidth=1.76 midlayer3_minwidth=1.76 midlayer3_maxwidth=1.76 midlayer4_minwidth=1.76 midlayer4_maxwidth=1.76 bottomlayer_minwidth=5.56 bottomlayer_prefwidth=5.56 impedancedriven=TRUE minimp=75.000000 maximp=75.000000 favimp=75.000000
Width "Schematic Width Constraint_117" [InNet('NetC79_1')] p47: maxlimit=12.34 minlimit=0 preferedwidth=5.07 toplayer_minwidth=12.34 toplayer_prefwidth=12.34 midlayer1_minwidth=5.07 midlayer1_maxwidth=5.07 midlayer2_minwidth=5.07 midlayer2_maxwidth=5.07 midlayer3_minwidth=5.07 midlayer3_maxwidth=5.07 midlayer4_minwidth=5.07 midlayer4_maxwidth=5.07 bottomlayer_minwidth=12.34 bottomlayer_prefwidth=12.34 impedancedriven=TRUE minimp=50.000000 maximp=50.000000 favimp=50.000000
Width "Schematic Width Constraint_116" [InNet('NetC80_2')] p48: maxlimit=5.56 minlimit=0 preferedwidth=1.76 toplayer_minwidth=5.56 toplayer_prefwidth=5.56 midlayer1_minwidth=1.76 midlayer1_maxwidth=1.76 midlayer2_minwidth=1.76 midlayer2_maxwidth=1.76 midlayer3_minwidth=1.76 midlayer3_maxwidth=1.76 midlayer4_minwidth=1.76 midlayer4_maxwidth=1.76 bottomlayer_minwidth=5.56 bottomlayer_prefwidth=5.56 impedancedriven=TRUE minimp=75.000000 maximp=75.000000 favimp=75.000000
Width "Schematic Width Constraint_115" [InNet('OUTC2-')] p49: maxlimit=12.34 minlimit=0 preferedwidth=5.07 toplayer_minwidth=12.34 toplayer_prefwidth=12.34 midlayer1_minwidth=5.07 midlayer1_maxwidth=5.07 midlayer2_minwidth=5.07 midlayer2_maxwidth=5.07 midlayer3_minwidth=5.07 midlayer3_maxwidth=5.07 midlayer4_minwidth=5.07 midlayer4_maxwidth=5.07 bottomlayer_minwidth=12.34 bottomlayer_prefwidth=12.34 impedancedriven=TRUE minimp=50.000000 maximp=50.000000 favimp=50.000000
Width "Schematic Width Constraint_114" [InNet('NetC91_2')] p50: maxlimit=5.56 minlimit=0 preferedwidth=1.76 toplayer_minwidth=5.56 toplayer_prefwidth=5.56 midlayer1_minwidth=1.76 midlayer1_maxwidth=1.76 midlayer2_minwidth=1.76 midlayer2_maxwidth=1.76 midlayer3_minwidth=1.76 midlayer3_maxwidth=1.76 midlayer4_minwidth=1.76 midlayer4_maxwidth=1.76 bottomlayer_minwidth=5.56 bottomlayer_prefwidth=5.56 impedancedriven=TRUE minimp=75.000000 maximp=75.000000 favimp=75.000000
Width "Schematic Width Constraint_113" [InNet('NetC92_2')] p51: maxlimit=12.34 minlimit=0 preferedwidth=5.07 toplayer_minwidth=12.34 toplayer_prefwidth=12.34 midlayer1_minwidth=5.07 midlayer1_maxwidth=5.07 midlayer2_minwidth=5.07 midlayer2_maxwidth=5.07 midlayer3_minwidth=5.07 midlayer3_maxwidth=5.07 midlayer4_minwidth=5.07 midlayer4_maxwidth=5.07 bottomlayer_minwidth=12.34 bottomlayer_prefwidth=12.34 impedancedriven=TRUE minimp=50.000000 maximp=50.000000 favimp=50.000000
Width "Schematic Width Constraint_112" [InNet('NetC109_2')] p52: maxlimit=5.56 minlimit=0 preferedwidth=1.76 toplayer_minwidth=5.56 toplayer_prefwidth=5.56 midlayer1_minwidth=1.76 midlayer1_maxwidth=1.76 midlayer2_minwidth=1.76 midlayer2_maxwidth=1.76 midlayer3_minwidth=1.76 midlayer3_maxwidth=1.76 midlayer4_minwidth=1.76 midlayer4_maxwidth=1.76 bottomlayer_minwidth=5.56 bottomlayer_prefwidth=5.56 impedancedriven=TRUE minimp=75.000000 maximp=75.000000 favimp=75.000000
Width "Schematic Width Constraint_111" [InNet('NetC78_2')] p53: maxlimit=5.56 minlimit=0 preferedwidth=1.76 toplayer_minwidth=5.56 toplayer_prefwidth=5.56 midlayer1_minwidth=1.76 midlayer1_maxwidth=1.76 midlayer2_minwidth=1.76 midlayer2_maxwidth=1.76 midlayer3_minwidth=1.76 midlayer3_maxwidth=1.76 midlayer4_minwidth=1.76 midlayer4_maxwidth=1.76 bottomlayer_minwidth=5.56 bottomlayer_prefwidth=5.56 impedancedriven=TRUE minimp=75.000000 maximp=75.000000 favimp=75.000000
Width "Schematic Width Constraint_110" [InNet('NetJP11_5')] p54: maxlimit=12.34 minlimit=0 preferedwidth=5.07 toplayer_minwidth=2.05 toplayer_prefwidth=12.34 midlayer1_minwidth=0.3 midlayer1_maxwidth=5.07 midlayer2_minwidth=0.3 midlayer2_maxwidth=5.07 midlayer3_minwidth=0.3 midlayer3_maxwidth=5.07 midlayer4_minwidth=0.3 midlayer4_maxwidth=5.07 bottomlayer_minwidth=2.05 bottomlayer_prefwidth=12.34 impedancedriven=TRUE minimp=50.000000 maximp=100.000000 favimp=50.000000
Width "Schematic Width Constraint_109" [InNet('NetC84_2')] p55: maxlimit=5.56 minlimit=0 preferedwidth=1.76 toplayer_minwidth=5.56 toplayer_prefwidth=5.56 midlayer1_minwidth=1.76 midlayer1_maxwidth=1.76 midlayer2_minwidth=1.76 midlayer2_maxwidth=1.76 midlayer3_minwidth=1.76 midlayer3_maxwidth=1.76 midlayer4_minwidth=1.76 midlayer4_maxwidth=1.76 bottomlayer_minwidth=5.56 bottomlayer_prefwidth=5.56 impedancedriven=TRUE minimp=75.000000 maximp=75.000000 favimp=75.000000
Width "Schematic Width Constraint_108" [InNet('OUTC2+')] p56: maxlimit=12.34 minlimit=0 preferedwidth=5.07 toplayer_minwidth=12.34 toplayer_prefwidth=12.34 midlayer1_minwidth=5.07 midlayer1_maxwidth=5.07 midlayer2_minwidth=5.07 midlayer2_maxwidth=5.07 midlayer3_minwidth=5.07 midlayer3_maxwidth=5.07 midlayer4_minwidth=5.07 midlayer4_maxwidth=5.07 bottomlayer_minwidth=12.34 bottomlayer_prefwidth=12.34 impedancedriven=TRUE minimp=50.000000 maximp=50.000000 favimp=50.000000
Width "Schematic Width Constraint_107" [InNet('NetC111_2')] p57: maxlimit=5.56 minlimit=0 preferedwidth=1.76 toplayer_minwidth=5.56 toplayer_prefwidth=5.56 midlayer1_minwidth=1.76 midlayer1_maxwidth=1.76 midlayer2_minwidth=1.76 midlayer2_maxwidth=1.76 midlayer3_minwidth=1.76 midlayer3_maxwidth=1.76 midlayer4_minwidth=1.76 midlayer4_maxwidth=1.76 bottomlayer_minwidth=5.56 bottomlayer_prefwidth=5.56 impedancedriven=TRUE minimp=75.000000 maximp=75.000000 favimp=75.000000
Width "Schematic Width Constraint_106" [InNet('NetR96_1')] p58: maxlimit=5.56 minlimit=0 preferedwidth=1.76 toplayer_minwidth=5.56 toplayer_prefwidth=5.56 midlayer1_minwidth=1.76 midlayer1_maxwidth=1.76 midlayer2_minwidth=1.76 midlayer2_maxwidth=1.76 midlayer3_minwidth=1.76 midlayer3_maxwidth=1.76 midlayer4_minwidth=1.76 midlayer4_maxwidth=1.76 bottomlayer_minwidth=5.56 bottomlayer_prefwidth=5.56 impedancedriven=TRUE minimp=75.000000 maximp=75.000000 favimp=75.000000
Width "Schematic Width Constraint_105" [InNet('NetJP12_5')] p59: maxlimit=12.34 minlimit=0 preferedwidth=5.07 toplayer_minwidth=12.34 toplayer_prefwidth=12.34 midlayer1_minwidth=5.07 midlayer1_maxwidth=5.07 midlayer2_minwidth=5.07 midlayer2_maxwidth=5.07 midlayer3_minwidth=5.07 midlayer3_maxwidth=5.07 midlayer4_minwidth=5.07 midlayer4_maxwidth=5.07 bottomlayer_minwidth=12.34 bottomlayer_prefwidth=12.34 impedancedriven=TRUE minimp=50.000000 maximp=50.000000 favimp=50.000000
Width "Schematic Width Constraint_104" [InNet('NetC102_2')] p60: maxlimit=12.34 minlimit=0 preferedwidth=5.07 toplayer_minwidth=12.34 toplayer_prefwidth=12.34 midlayer1_minwidth=5.07 midlayer1_maxwidth=5.07 midlayer2_minwidth=5.07 midlayer2_maxwidth=5.07 midlayer3_minwidth=5.07 midlayer3_maxwidth=5.07 midlayer4_minwidth=5.07 midlayer4_maxwidth=5.07 bottomlayer_minwidth=12.34 bottomlayer_prefwidth=12.34 impedancedriven=TRUE minimp=50.000000 maximp=50.000000 favimp=50.000000
Width "Schematic Width Constraint_103" [InNet('NetC108_2')] p61: maxlimit=5.56 minlimit=0 preferedwidth=1.76 toplayer_minwidth=5.56 toplayer_prefwidth=5.56 midlayer1_minwidth=1.76 midlayer1_maxwidth=1.76 midlayer2_minwidth=1.76 midlayer2_maxwidth=1.76 midlayer3_minwidth=1.76 midlayer3_maxwidth=1.76 midlayer4_minwidth=1.76 midlayer4_maxwidth=1.76 bottomlayer_minwidth=5.56 bottomlayer_prefwidth=5.56 impedancedriven=TRUE minimp=75.000000 maximp=75.000000 favimp=75.000000
Width "Schematic Width Constraint_102" [InNet('NetC80_1')] p62: maxlimit=5.56 minlimit=0 preferedwidth=1.76 toplayer_minwidth=5.56 toplayer_prefwidth=5.56 midlayer1_minwidth=1.76 midlayer1_maxwidth=1.76 midlayer2_minwidth=1.76 midlayer2_maxwidth=1.76 midlayer3_minwidth=1.76 midlayer3_maxwidth=1.76 midlayer4_minwidth=1.76 midlayer4_maxwidth=1.76 bottomlayer_minwidth=5.56 bottomlayer_prefwidth=5.56 impedancedriven=TRUE minimp=75.000000 maximp=75.000000 favimp=75.000000
Width "Schematic Width Constraint_101" [InNet('NetL1_1')] p63: maxlimit=5.56 minlimit=0 preferedwidth=1.76 toplayer_minwidth=5.56 toplayer_prefwidth=5.56 midlayer1_minwidth=1.76 midlayer1_maxwidth=1.76 midlayer2_minwidth=1.76 midlayer2_maxwidth=1.76 midlayer3_minwidth=1.76 midlayer3_maxwidth=1.76 midlayer4_minwidth=1.76 midlayer4_maxwidth=1.76 bottomlayer_minwidth=5.56 bottomlayer_prefwidth=5.56 impedancedriven=TRUE minimp=75.000000 maximp=75.000000 favimp=75.000000
Width "Schematic Width Constraint_100" [InNet('NetR35_1')] p64: maxlimit=12.34 minlimit=0 preferedwidth=5.07 toplayer_minwidth=3.18 toplayer_prefwidth=12.34 midlayer1_minwidth=0.75 midlayer1_maxwidth=5.07 midlayer2_minwidth=0.75 midlayer2_maxwidth=5.07 midlayer3_minwidth=0.75 midlayer3_maxwidth=5.07 midlayer4_minwidth=0.75 midlayer4_maxwidth=5.07 bottomlayer_minwidth=3.18 bottomlayer_prefwidth=12.34 impedancedriven=TRUE minimp=50.000000 maximp=90.000000 favimp=50.000000
Width "Schematic Width Constraint_99" [InNet('REFCLKD+')] p65: maxlimit=12.34 minlimit=0 preferedwidth=5.07 toplayer_minwidth=12.34 toplayer_prefwidth=12.34 midlayer1_minwidth=5.07 midlayer1_maxwidth=5.07 midlayer2_minwidth=5.07 midlayer2_maxwidth=5.07 midlayer3_minwidth=5.07 midlayer3_maxwidth=5.07 midlayer4_minwidth=5.07 midlayer4_maxwidth=5.07 bottomlayer_minwidth=12.34 bottomlayer_prefwidth=12.34 impedancedriven=TRUE minimp=50.000000 maximp=50.000000 favimp=50.000000
Width "Schematic Width Constraint_98" [InNet('NetC75_1')] p66: maxlimit=5.56 minlimit=0 preferedwidth=1.76 toplayer_minwidth=5.56 toplayer_prefwidth=5.56 midlayer1_minwidth=1.76 midlayer1_maxwidth=1.76 midlayer2_minwidth=1.76 midlayer2_maxwidth=1.76 midlayer3_minwidth=1.76 midlayer3_maxwidth=1.76 midlayer4_minwidth=1.76 midlayer4_maxwidth=1.76 bottomlayer_minwidth=5.56 bottomlayer_prefwidth=5.56 impedancedriven=TRUE minimp=75.000000 maximp=75.000000 favimp=75.000000
Width "Schematic Width Constraint_97" [InNet('REFCLKC-')] p67: maxlimit=12.34 minlimit=0 preferedwidth=5.07 toplayer_minwidth=12.34 toplayer_prefwidth=12.34 midlayer1_minwidth=5.07 midlayer1_maxwidth=5.07 midlayer2_minwidth=5.07 midlayer2_maxwidth=5.07 midlayer3_minwidth=5.07 midlayer3_maxwidth=5.07 midlayer4_minwidth=5.07 midlayer4_maxwidth=5.07 bottomlayer_minwidth=12.34 bottomlayer_prefwidth=12.34 impedancedriven=TRUE minimp=50.000000 maximp=50.000000 favimp=50.000000
Width "Schematic Width Constraint_96" [InNet('REFCLKB-')] p68: maxlimit=12.34 minlimit=0 preferedwidth=5.07 toplayer_minwidth=2.05 toplayer_prefwidth=12.34 midlayer1_minwidth=0.3 midlayer1_maxwidth=5.07 midlayer2_minwidth=0.3 midlayer2_maxwidth=5.07 midlayer3_minwidth=0.3 midlayer3_maxwidth=5.07 midlayer4_minwidth=0.3 midlayer4_maxwidth=5.07 bottomlayer_minwidth=2.05 bottomlayer_prefwidth=12.34 impedancedriven=TRUE minimp=50.000000 maximp=100.000000 favimp=50.000000
Width "Schematic Width Constraint_95" [InNet('OUTC1-')] p69: maxlimit=12.34 minlimit=0 preferedwidth=5.07 toplayer_minwidth=12.34 toplayer_prefwidth=12.34 midlayer1_minwidth=5.07 midlayer1_maxwidth=5.07 midlayer2_minwidth=5.07 midlayer2_maxwidth=5.07 midlayer3_minwidth=5.07 midlayer3_maxwidth=5.07 midlayer4_minwidth=5.07 midlayer4_maxwidth=5.07 bottomlayer_minwidth=12.34 bottomlayer_prefwidth=12.34 impedancedriven=TRUE minimp=50.000000 maximp=50.000000 favimp=50.000000
Width "Schematic Width Constraint_94" [InNet('NetJP12_3')] p70: maxlimit=12.34 minlimit=0 preferedwidth=5.07 toplayer_minwidth=12.34 toplayer_prefwidth=12.34 midlayer1_minwidth=5.07 midlayer1_maxwidth=5.07 midlayer2_minwidth=5.07 midlayer2_maxwidth=5.07 midlayer3_minwidth=5.07 midlayer3_maxwidth=5.07 midlayer4_minwidth=5.07 midlayer4_maxwidth=5.07 bottomlayer_minwidth=12.34 bottomlayer_prefwidth=12.34 impedancedriven=TRUE minimp=50.000000 maximp=50.000000 favimp=50.000000
Width "Schematic Width Constraint_93" [InNet('REFCLKA-')] p71: maxlimit=12.34 minlimit=0 preferedwidth=5.07 toplayer_minwidth=12.34 toplayer_prefwidth=12.34 midlayer1_minwidth=5.07 midlayer1_maxwidth=5.07 midlayer2_minwidth=5.07 midlayer2_maxwidth=5.07 midlayer3_minwidth=5.07 midlayer3_maxwidth=5.07 midlayer4_minwidth=5.07 midlayer4_maxwidth=5.07 bottomlayer_minwidth=12.34 bottomlayer_prefwidth=12.34 impedancedriven=TRUE minimp=50.000000 maximp=50.000000 favimp=50.000000
Width "Schematic Width Constraint_92" [InNet('NetC119_1')] p72: maxlimit=12.34 minlimit=0 preferedwidth=5.07 toplayer_minwidth=12.34 toplayer_prefwidth=12.34 midlayer1_minwidth=5.07 midlayer1_maxwidth=5.07 midlayer2_minwidth=5.07 midlayer2_maxwidth=5.07 midlayer3_minwidth=5.07 midlayer3_maxwidth=5.07 midlayer4_minwidth=5.07 midlayer4_maxwidth=5.07 bottomlayer_minwidth=12.34 bottomlayer_prefwidth=12.34 impedancedriven=TRUE minimp=50.000000 maximp=50.000000 favimp=50.000000
Width "Schematic Width Constraint_91" [InNet('NetC84_1')] p73: maxlimit=5.56 minlimit=0 preferedwidth=1.76 toplayer_minwidth=5.56 toplayer_prefwidth=5.56 midlayer1_minwidth=1.76 midlayer1_maxwidth=1.76 midlayer2_minwidth=1.76 midlayer2_maxwidth=1.76 midlayer3_minwidth=1.76 midlayer3_maxwidth=1.76 midlayer4_minwidth=1.76 midlayer4_maxwidth=1.76 bottomlayer_minwidth=5.56 bottomlayer_prefwidth=5.56 impedancedriven=TRUE minimp=75.000000 maximp=75.000000 favimp=75.000000
Width "Schematic Width Constraint_90" [InNet('INA1+')] p74: maxlimit=12.34 minlimit=0 preferedwidth=5.07 toplayer_minwidth=12.34 toplayer_prefwidth=12.34 midlayer1_minwidth=5.07 midlayer1_maxwidth=5.07 midlayer2_minwidth=5.07 midlayer2_maxwidth=5.07 midlayer3_minwidth=5.07 midlayer3_maxwidth=5.07 midlayer4_minwidth=5.07 midlayer4_maxwidth=5.07 bottomlayer_minwidth=12.34 bottomlayer_prefwidth=12.34 impedancedriven=TRUE minimp=50.000000 maximp=50.000000 favimp=50.000000
Width "Schematic Width Constraint_89" [InNet('NetR38_2')] p75: maxlimit=12.34 minlimit=0 preferedwidth=5.07 toplayer_minwidth=3.18 toplayer_prefwidth=12.34 midlayer1_minwidth=0.75 midlayer1_maxwidth=5.07 midlayer2_minwidth=0.75 midlayer2_maxwidth=5.07 midlayer3_minwidth=0.75 midlayer3_maxwidth=5.07 midlayer4_minwidth=0.75 midlayer4_maxwidth=5.07 bottomlayer_minwidth=3.18 bottomlayer_prefwidth=12.34 impedancedriven=TRUE minimp=50.000000 maximp=90.000000 favimp=50.000000
Width "Schematic Width Constraint_88" [InNet('INA2-')] p76: maxlimit=12.34 minlimit=0 preferedwidth=5.07 toplayer_minwidth=12.34 toplayer_prefwidth=12.34 midlayer1_minwidth=5.07 midlayer1_maxwidth=5.07 midlayer2_minwidth=5.07 midlayer2_maxwidth=5.07 midlayer3_minwidth=5.07 midlayer3_maxwidth=5.07 midlayer4_minwidth=5.07 midlayer4_maxwidth=5.07 bottomlayer_minwidth=12.34 bottomlayer_prefwidth=12.34 impedancedriven=TRUE minimp=50.000000 maximp=50.000000 favimp=50.000000
Width "Schematic Width Constraint_87" [InNet('OUTD1+')] p77: maxlimit=12.34 minlimit=0 preferedwidth=5.07 toplayer_minwidth=12.34 toplayer_prefwidth=12.34 midlayer1_minwidth=5.07 midlayer1_maxwidth=5.07 midlayer2_minwidth=5.07 midlayer2_maxwidth=5.07 midlayer3_minwidth=5.07 midlayer3_maxwidth=5.07 midlayer4_minwidth=5.07 midlayer4_maxwidth=5.07 bottomlayer_minwidth=12.34 bottomlayer_prefwidth=12.34 impedancedriven=TRUE minimp=50.000000 maximp=50.000000 favimp=50.000000
Width "Schematic Width Constraint_86" [InNet('NetC72_2')] p78: maxlimit=5.56 minlimit=0 preferedwidth=1.76 toplayer_minwidth=5.56 toplayer_prefwidth=5.56 midlayer1_minwidth=1.76 midlayer1_maxwidth=1.76 midlayer2_minwidth=1.76 midlayer2_maxwidth=1.76 midlayer3_minwidth=1.76 midlayer3_maxwidth=1.76 midlayer4_minwidth=1.76 midlayer4_maxwidth=1.76 bottomlayer_minwidth=5.56 bottomlayer_prefwidth=5.56 impedancedriven=TRUE minimp=75.000000 maximp=75.000000 favimp=75.000000
Width "Schematic Width Constraint_85" [InNet('NetC116_1')] p79: maxlimit=12.34 minlimit=0 preferedwidth=5.07 toplayer_minwidth=12.34 toplayer_prefwidth=12.34 midlayer1_minwidth=5.07 midlayer1_maxwidth=5.07 midlayer2_minwidth=5.07 midlayer2_maxwidth=5.07 midlayer3_minwidth=5.07 midlayer3_maxwidth=5.07 midlayer4_minwidth=5.07 midlayer4_maxwidth=5.07 bottomlayer_minwidth=12.34 bottomlayer_prefwidth=12.34 impedancedriven=TRUE minimp=50.000000 maximp=50.000000 favimp=50.000000
Width "Schematic Width Constraint_84" [InNet('NetC121_1')] p80: maxlimit=5.56 minlimit=0 preferedwidth=1.76 toplayer_minwidth=5.56 toplayer_prefwidth=5.56 midlayer1_minwidth=1.76 midlayer1_maxwidth=1.76 midlayer2_minwidth=1.76 midlayer2_maxwidth=1.76 midlayer3_minwidth=1.76 midlayer3_maxwidth=1.76 midlayer4_minwidth=1.76 midlayer4_maxwidth=1.76 bottomlayer_minwidth=5.56 bottomlayer_prefwidth=5.56 impedancedriven=TRUE minimp=75.000000 maximp=75.000000 favimp=75.000000
Width "Schematic Width Constraint_83" [InNet('NetC105_2')] p81: maxlimit=5.56 minlimit=0 preferedwidth=1.76 toplayer_minwidth=5.56 toplayer_prefwidth=5.56 midlayer1_minwidth=1.76 midlayer1_maxwidth=1.76 midlayer2_minwidth=1.76 midlayer2_maxwidth=1.76 midlayer3_minwidth=1.76 midlayer3_maxwidth=1.76 midlayer4_minwidth=1.76 midlayer4_maxwidth=1.76 bottomlayer_minwidth=5.56 bottomlayer_prefwidth=5.56 impedancedriven=TRUE minimp=75.000000 maximp=75.000000 favimp=75.000000
Width "Schematic Width Constraint_82" [InNet('NetC75_2')] p82: maxlimit=5.56 minlimit=0 preferedwidth=1.76 toplayer_minwidth=5.56 toplayer_prefwidth=5.56 midlayer1_minwidth=1.76 midlayer1_maxwidth=1.76 midlayer2_minwidth=1.76 midlayer2_maxwidth=1.76 midlayer3_minwidth=1.76 midlayer3_maxwidth=1.76 midlayer4_minwidth=1.76 midlayer4_maxwidth=1.76 bottomlayer_minwidth=5.56 bottomlayer_prefwidth=5.56 impedancedriven=TRUE minimp=75.000000 maximp=75.000000 favimp=75.000000
Width "Schematic Width Constraint_81" [InNet('NetC77_1')] p83: maxlimit=12.34 minlimit=0 preferedwidth=5.07 toplayer_minwidth=12.34 toplayer_prefwidth=12.34 midlayer1_minwidth=5.07 midlayer1_maxwidth=5.07 midlayer2_minwidth=5.07 midlayer2_maxwidth=5.07 midlayer3_minwidth=5.07 midlayer3_maxwidth=5.07 midlayer4_minwidth=5.07 midlayer4_maxwidth=5.07 bottomlayer_minwidth=12.34 bottomlayer_prefwidth=12.34 impedancedriven=TRUE minimp=50.000000 maximp=50.000000 favimp=50.000000
Width "Schematic Width Constraint_80" [InNet('NetC69_2')] p84: maxlimit=5.56 minlimit=0 preferedwidth=1.76 toplayer_minwidth=5.56 toplayer_prefwidth=5.56 midlayer1_minwidth=1.76 midlayer1_maxwidth=1.76 midlayer2_minwidth=1.76 midlayer2_maxwidth=1.76 midlayer3_minwidth=1.76 midlayer3_maxwidth=1.76 midlayer4_minwidth=1.76 midlayer4_maxwidth=1.76 bottomlayer_minwidth=5.56 bottomlayer_prefwidth=5.56 impedancedriven=TRUE minimp=75.000000 maximp=75.000000 favimp=75.000000
Width "Schematic Width Constraint_79" [InNet('NetR34_1')] p85: maxlimit=12.34 minlimit=0 preferedwidth=5.07 toplayer_minwidth=3.18 toplayer_prefwidth=12.34 midlayer1_minwidth=0.75 midlayer1_maxwidth=5.07 midlayer2_minwidth=0.75 midlayer2_maxwidth=5.07 midlayer3_minwidth=0.75 midlayer3_maxwidth=5.07 midlayer4_minwidth=0.75 midlayer4_maxwidth=5.07 bottomlayer_minwidth=3.18 bottomlayer_prefwidth=12.34 impedancedriven=TRUE minimp=50.000000 maximp=90.000000 favimp=50.000000
Width "Schematic Width Constraint_78" [InNet('NetC70_2')] p86: maxlimit=12.34 minlimit=0 preferedwidth=5.07 toplayer_minwidth=12.34 toplayer_prefwidth=12.34 midlayer1_minwidth=5.07 midlayer1_maxwidth=5.07 midlayer2_minwidth=5.07 midlayer2_maxwidth=5.07 midlayer3_minwidth=5.07 midlayer3_maxwidth=5.07 midlayer4_minwidth=5.07 midlayer4_maxwidth=5.07 bottomlayer_minwidth=12.34 bottomlayer_prefwidth=12.34 impedancedriven=TRUE minimp=50.000000 maximp=50.000000 favimp=50.000000